# Altium PCB Lite Carrier for Mu.PcbDoc (part 1 of 15)
Units mm, origin at the board's own origin, x right, y up, seen from the top; angles counter-clockwise.
Board outline 146 x 102 mm, 20 copper layers (F.Cu, F.Mask, B.Cu, B.Mask, In1.Cu, F.SilkS, In2.Cu, B.SilkS, F.Adhes, B.Adhes, F.Paste, B.Paste, Dwgs.User, Cmts.User, Eco1.User, Eco2.User, Edge.Cuts, Margin, B.CrtYd, F.CrtYd); 254 components, 382 nets, 1258 pads, 1020 vias.
Unrouted connection lines stored in the file: 113.
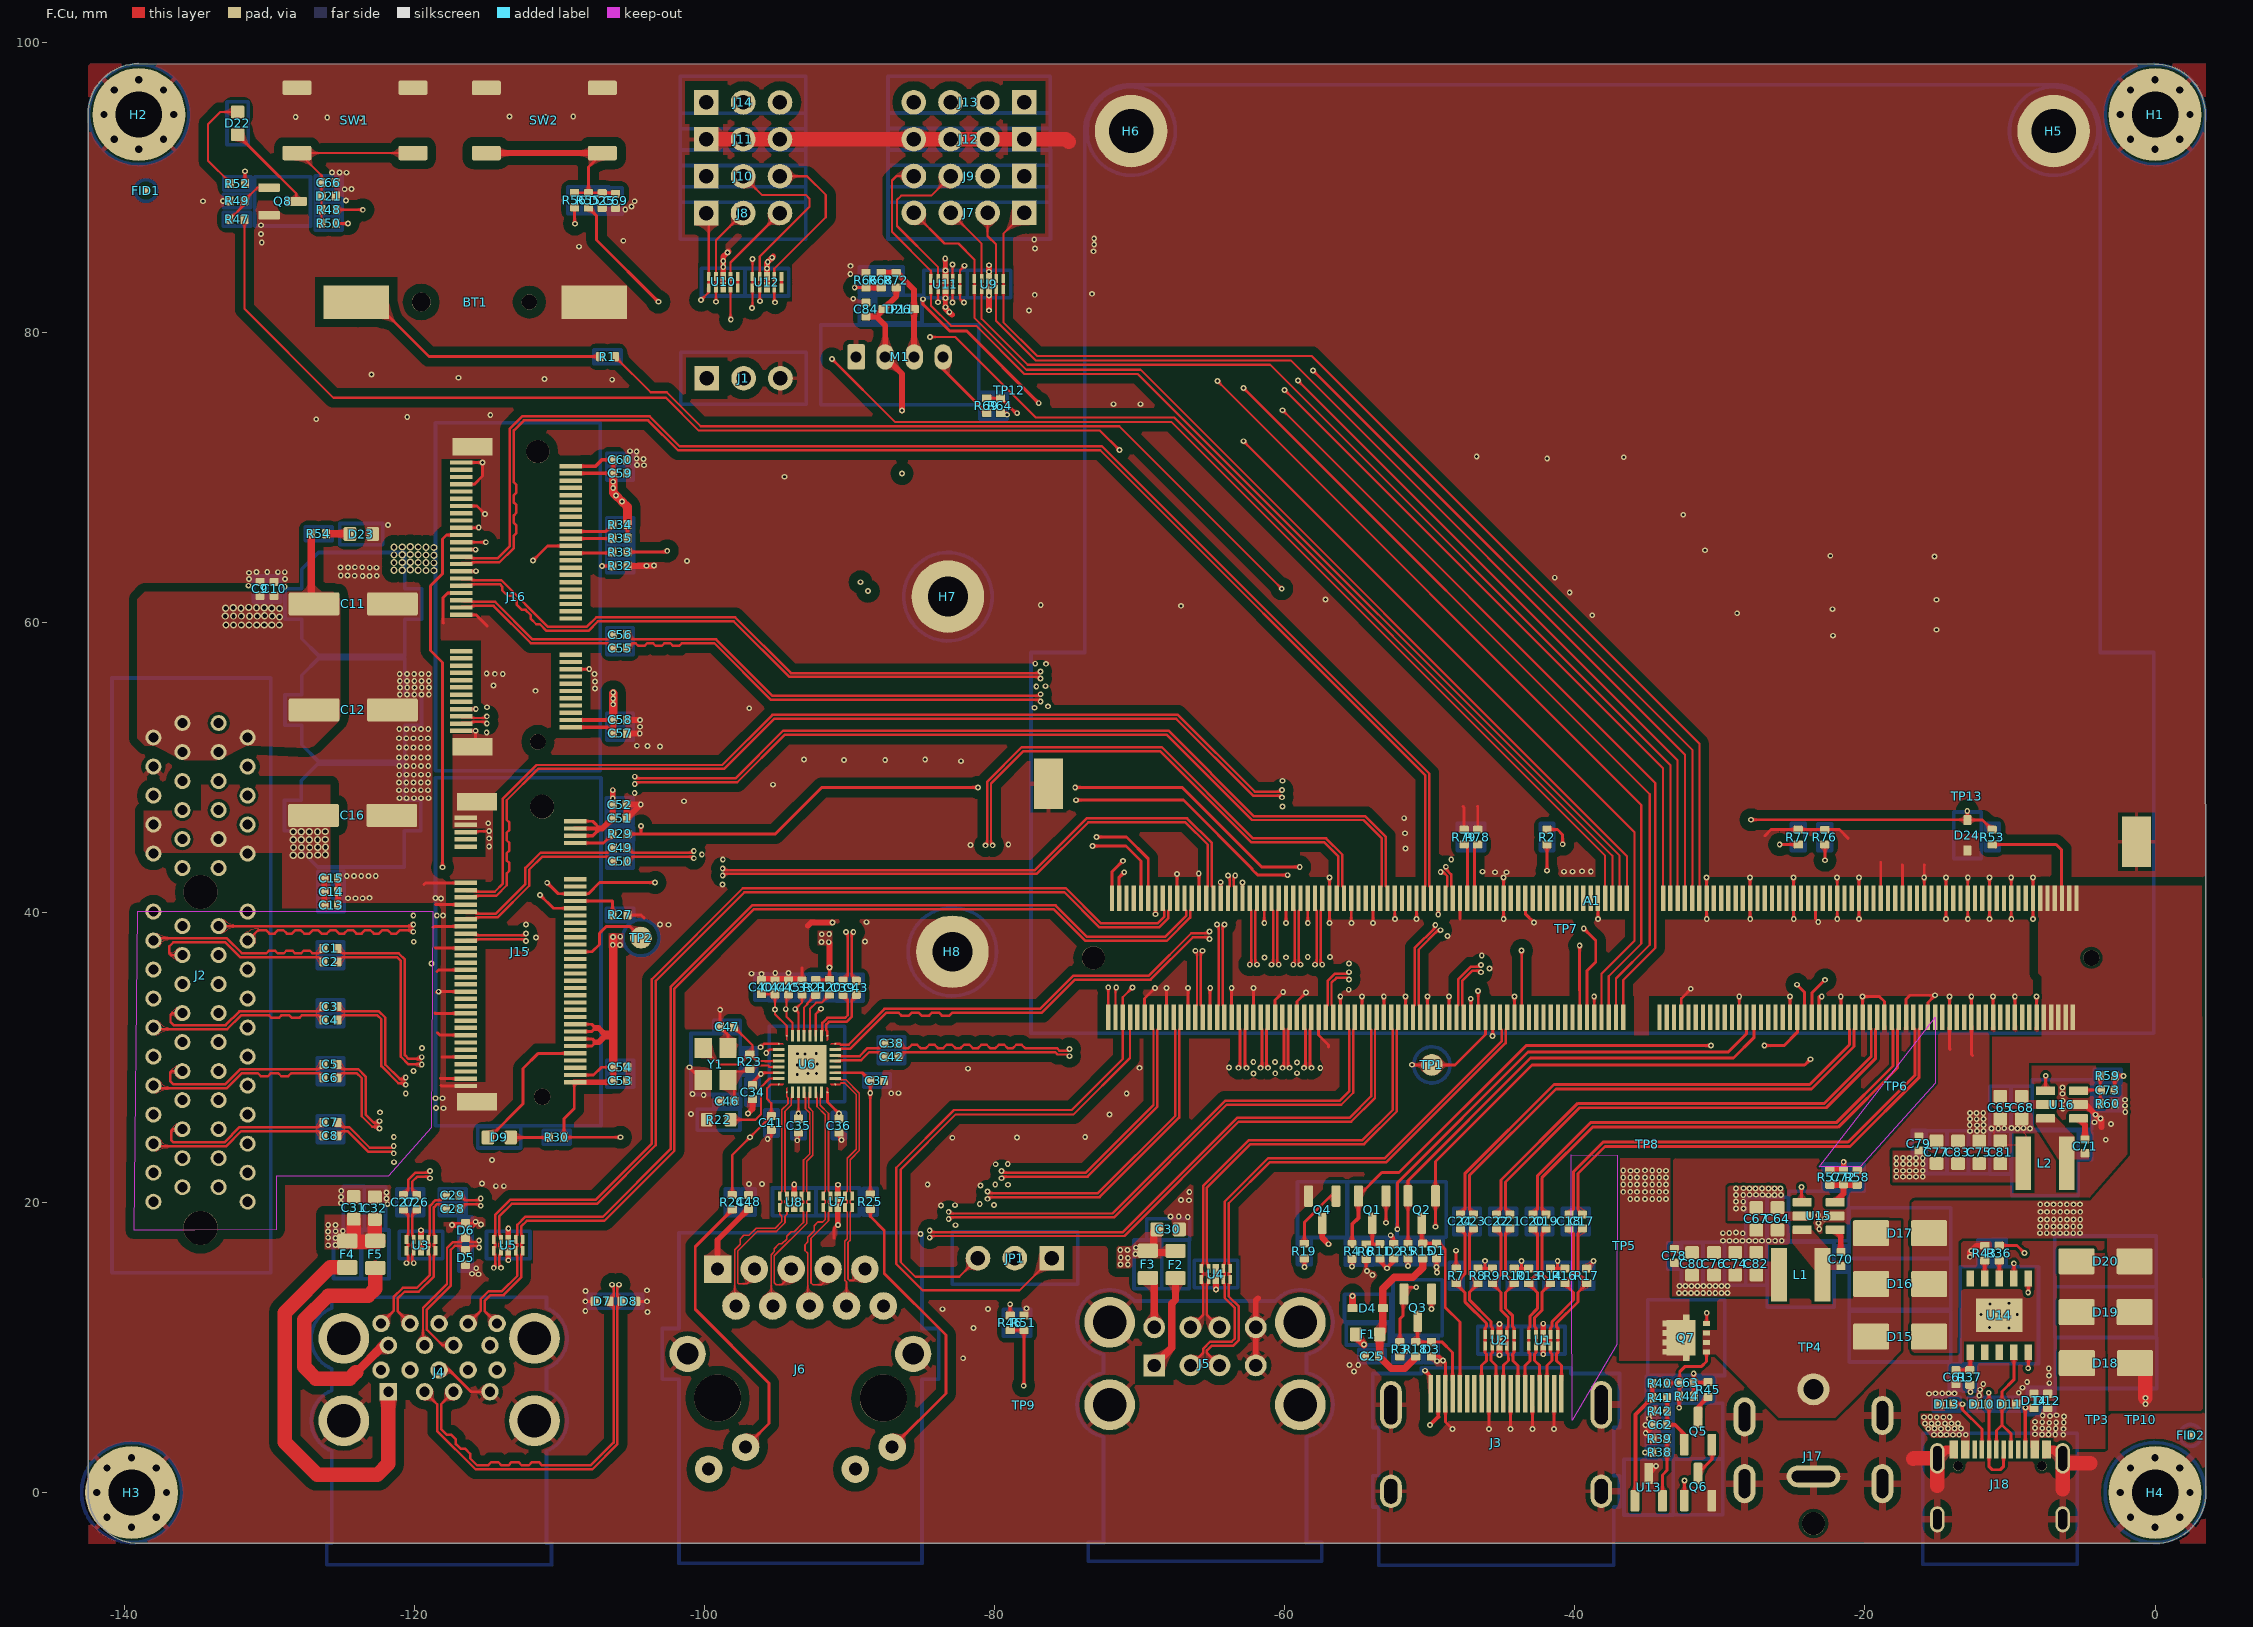
[diagram p0: F.Cu view]
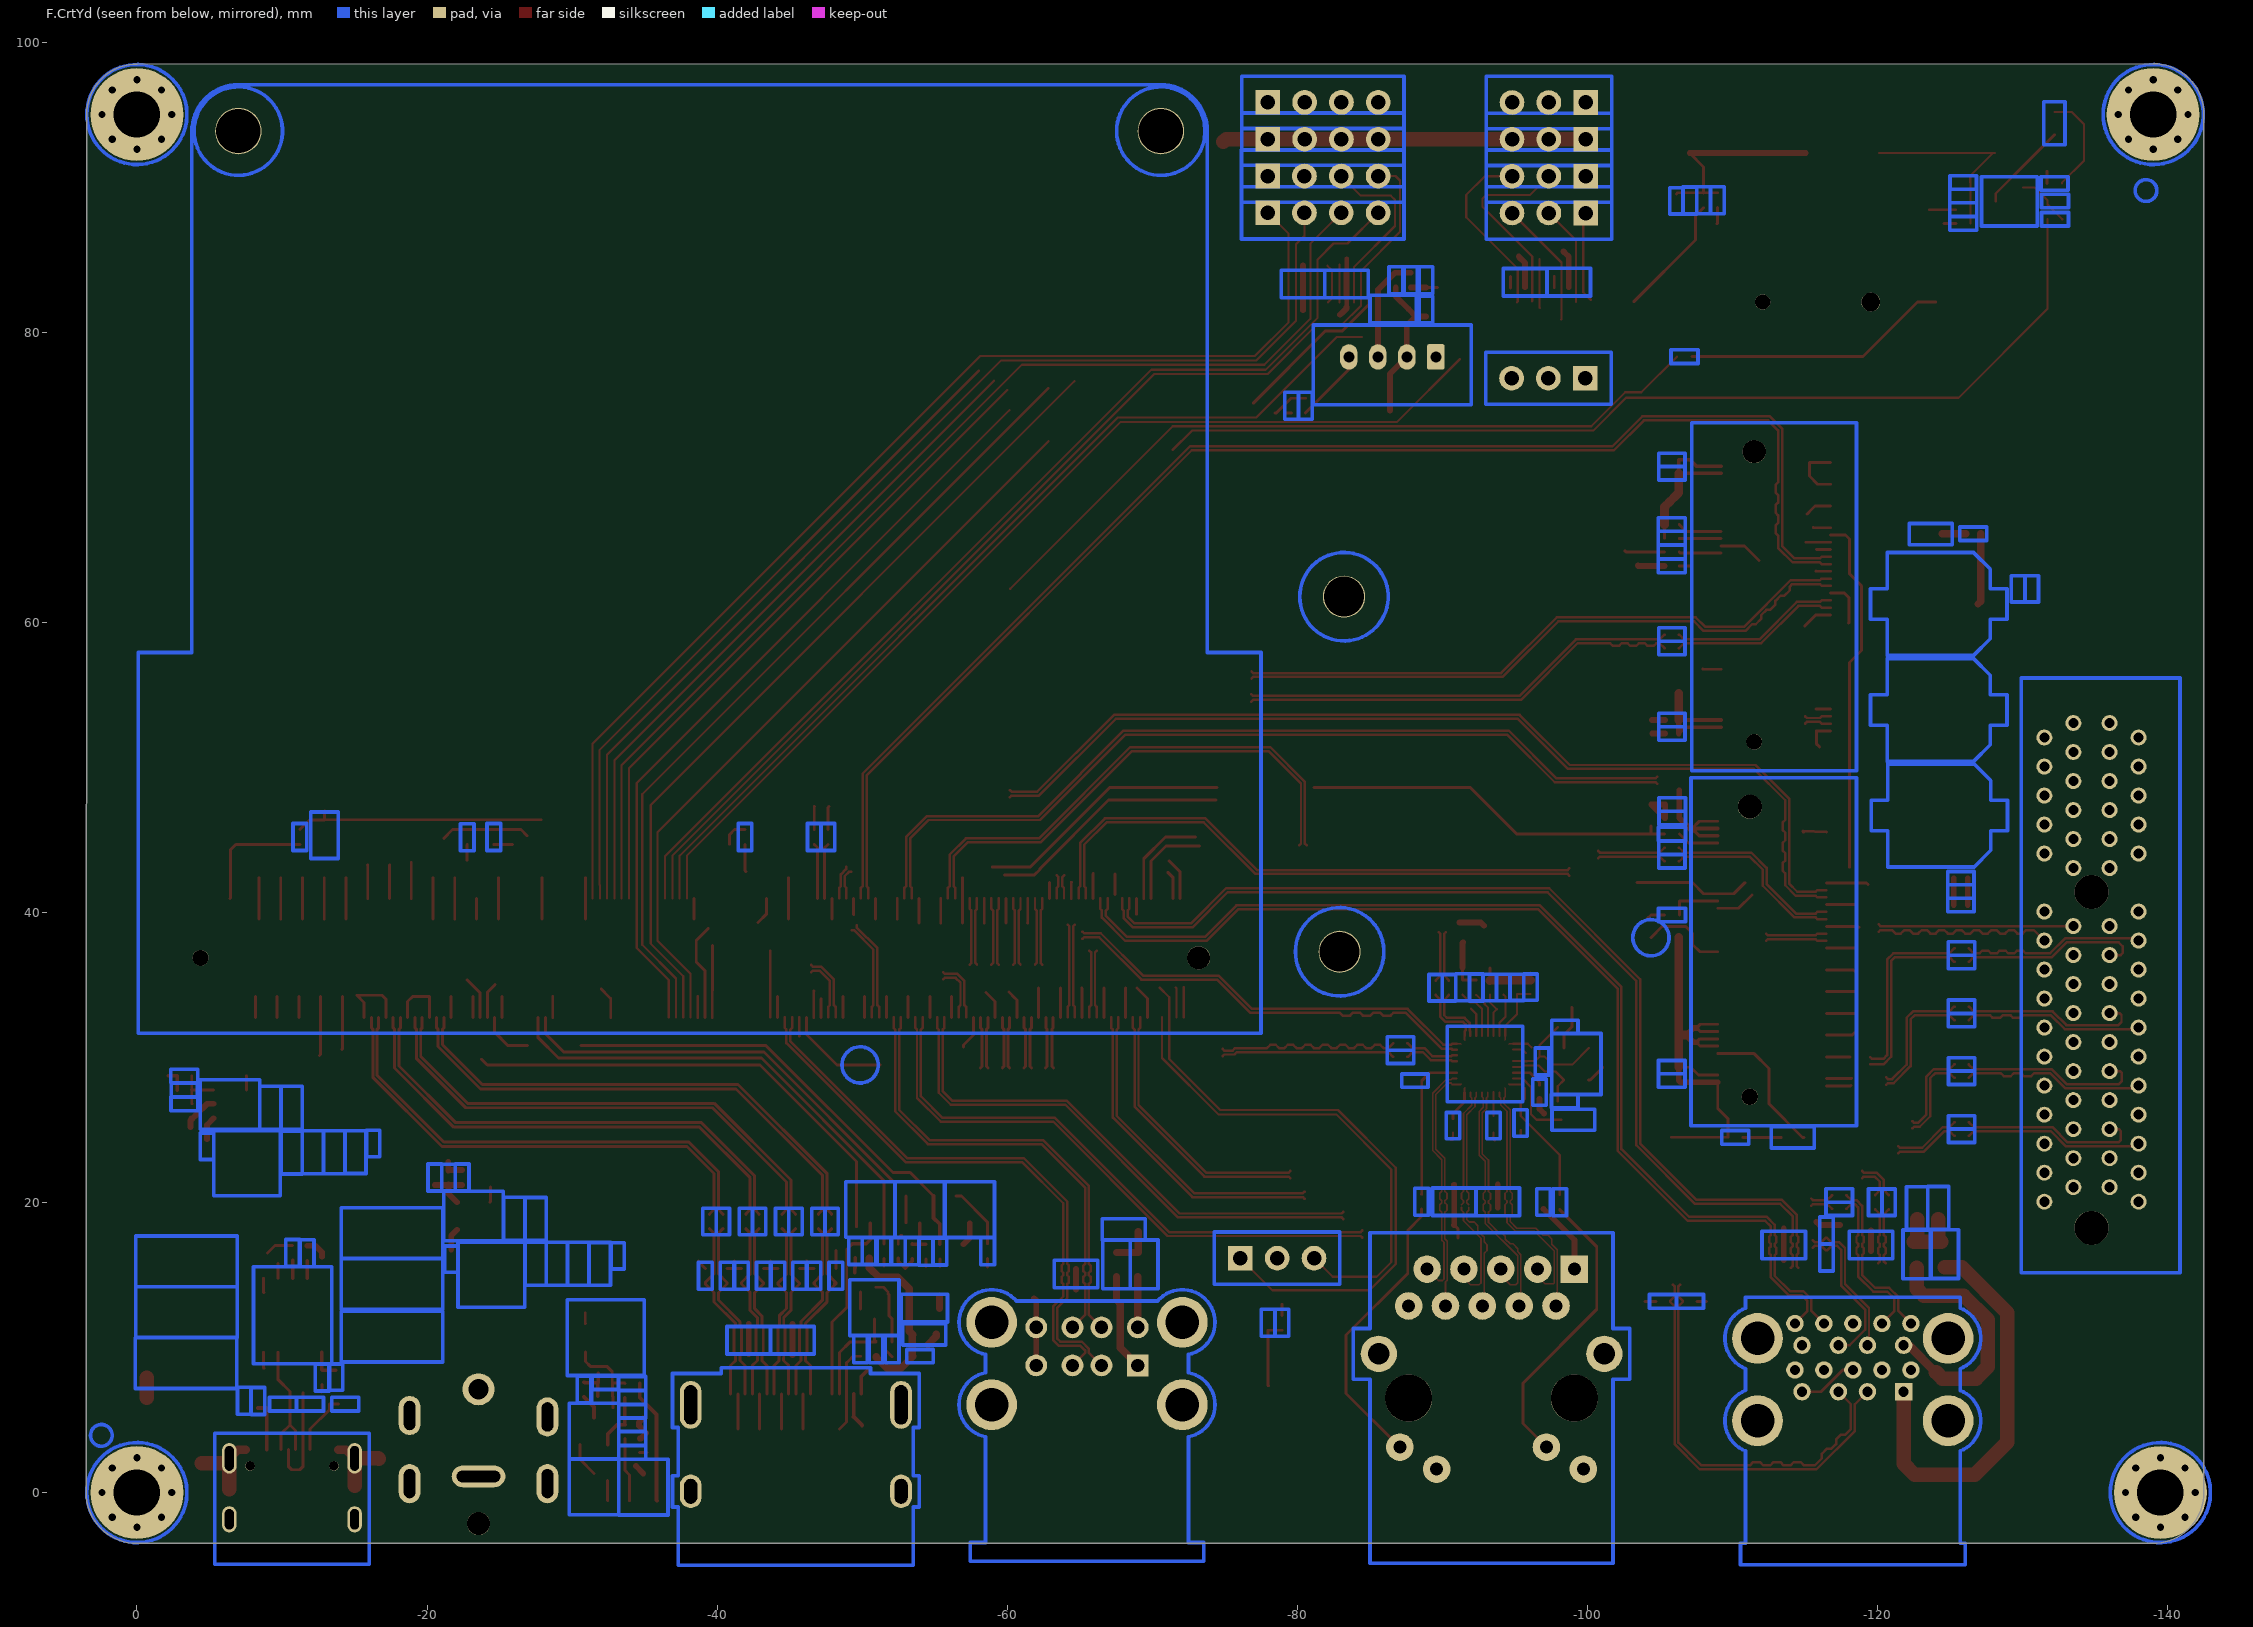
[diagram p1: F.CrtYd view, seen from below]
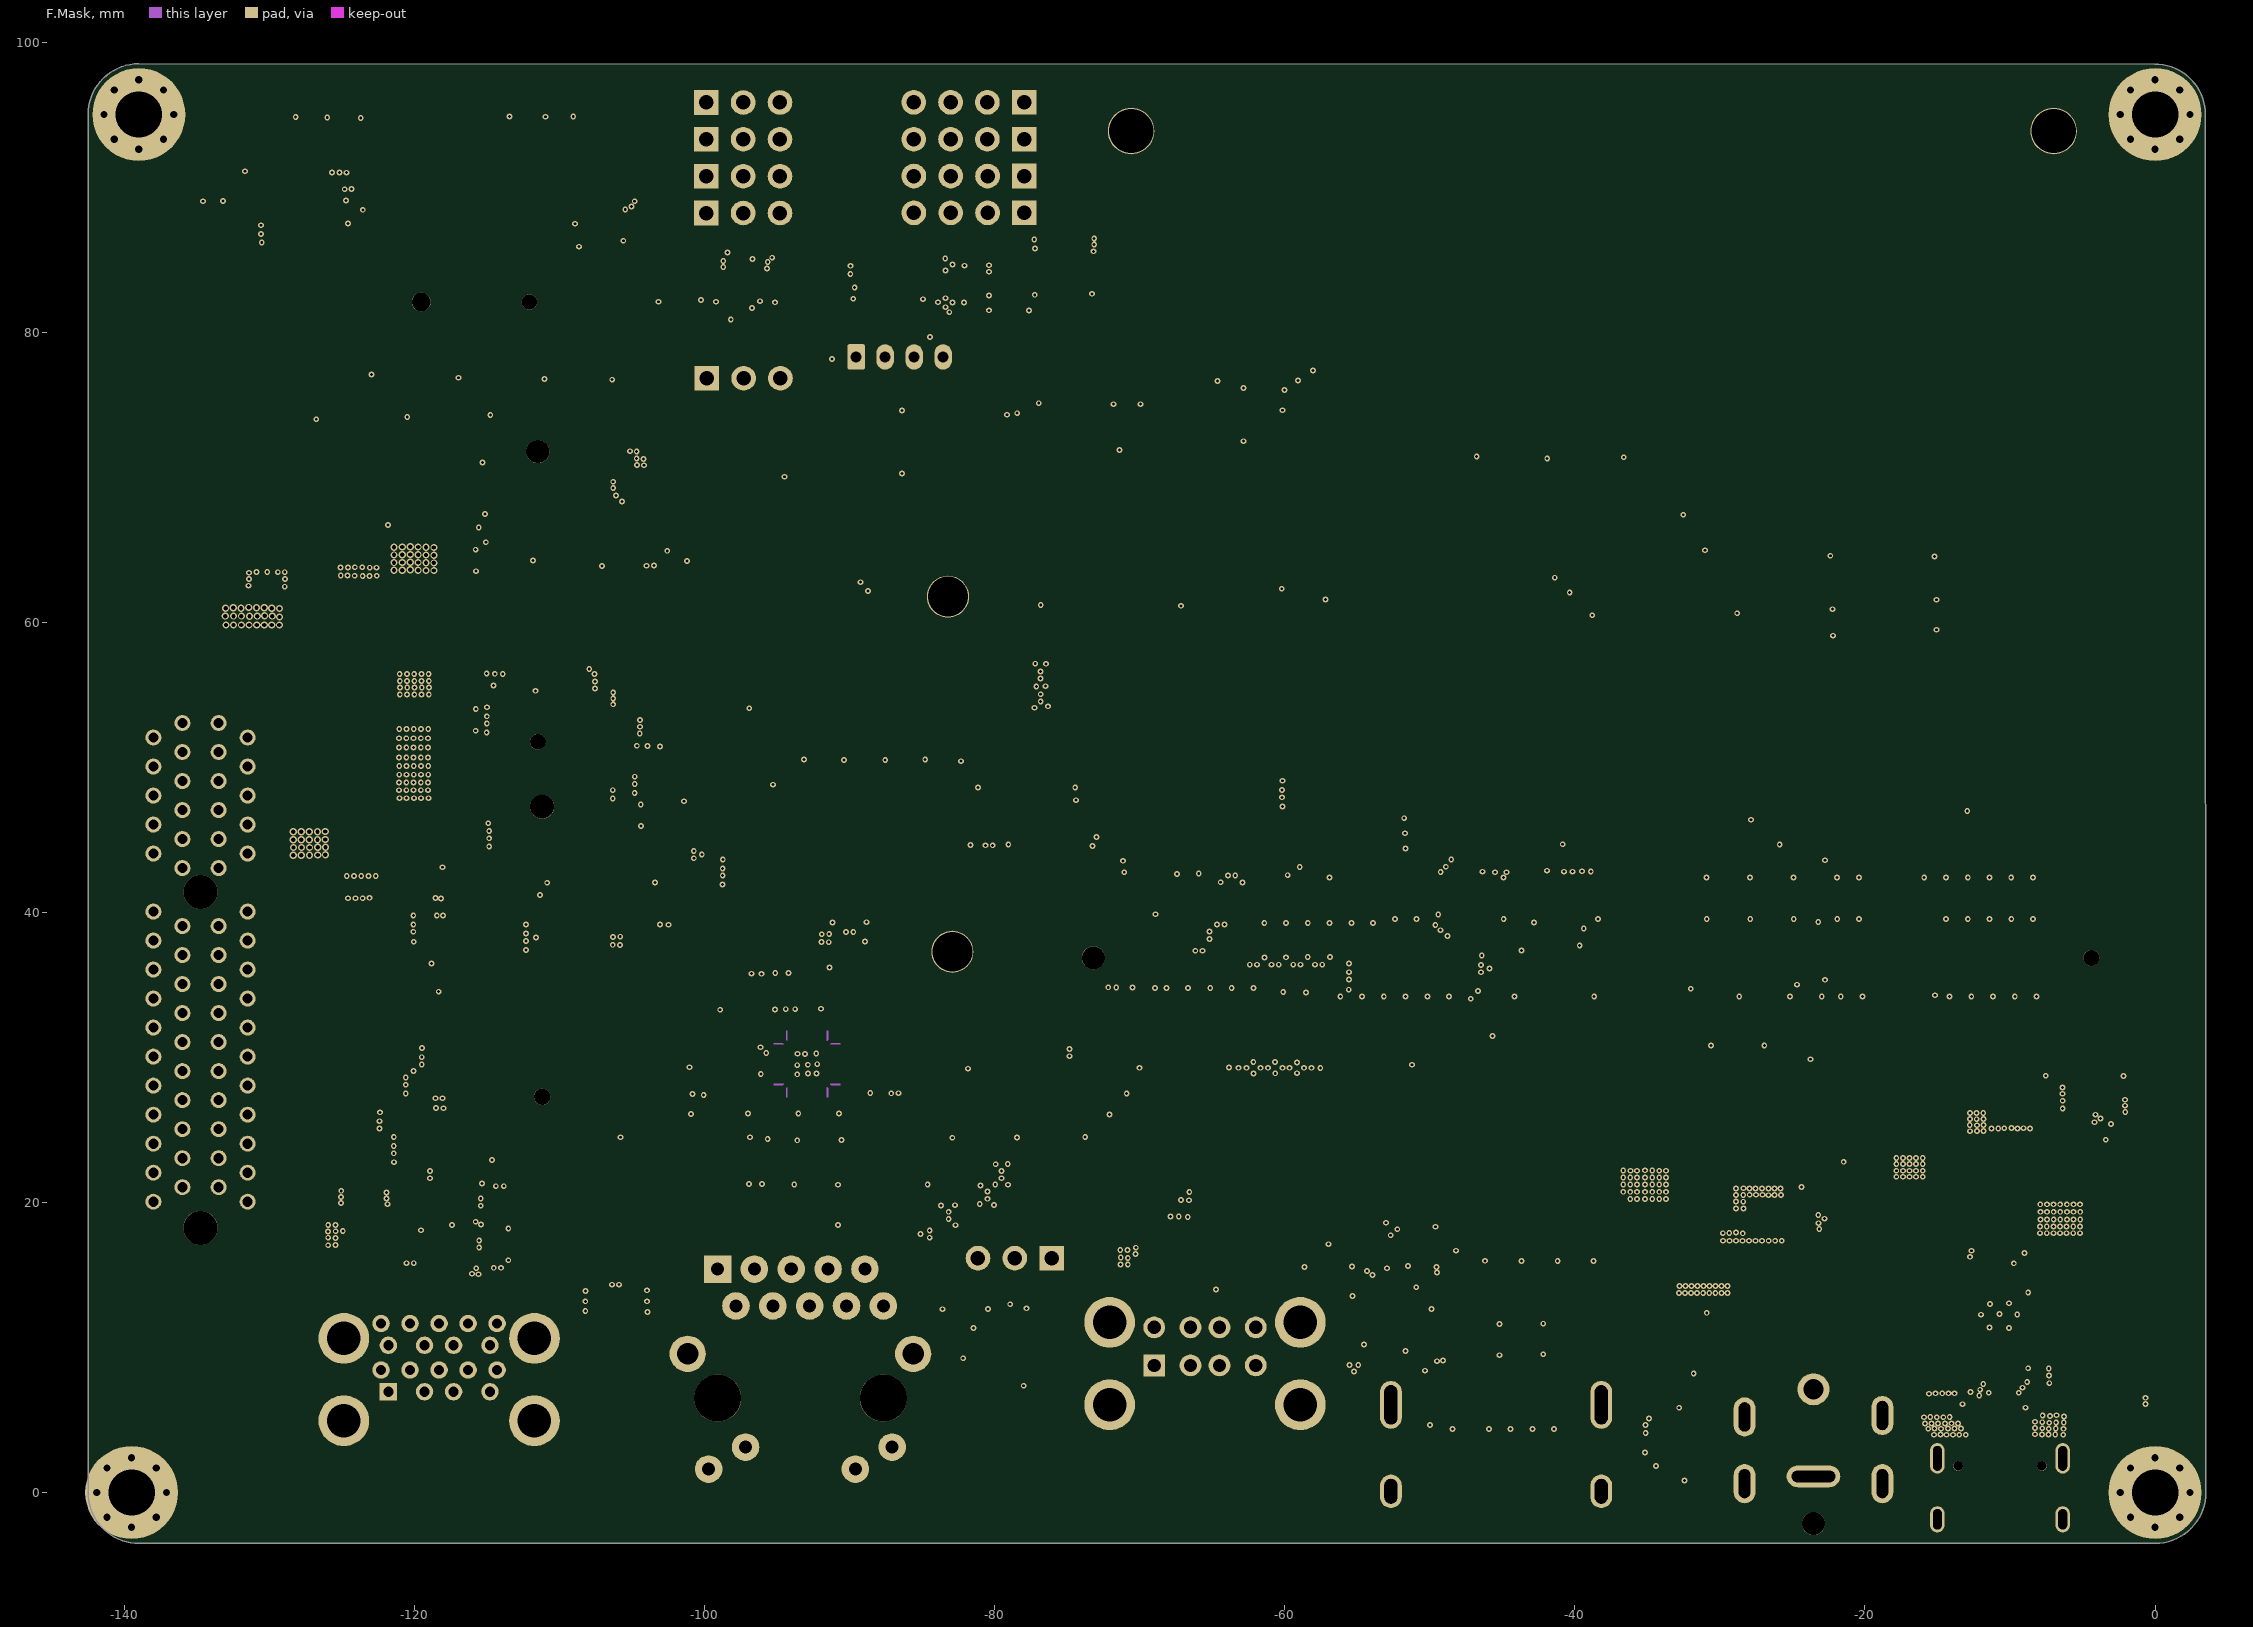
[diagram p2: F.Mask]
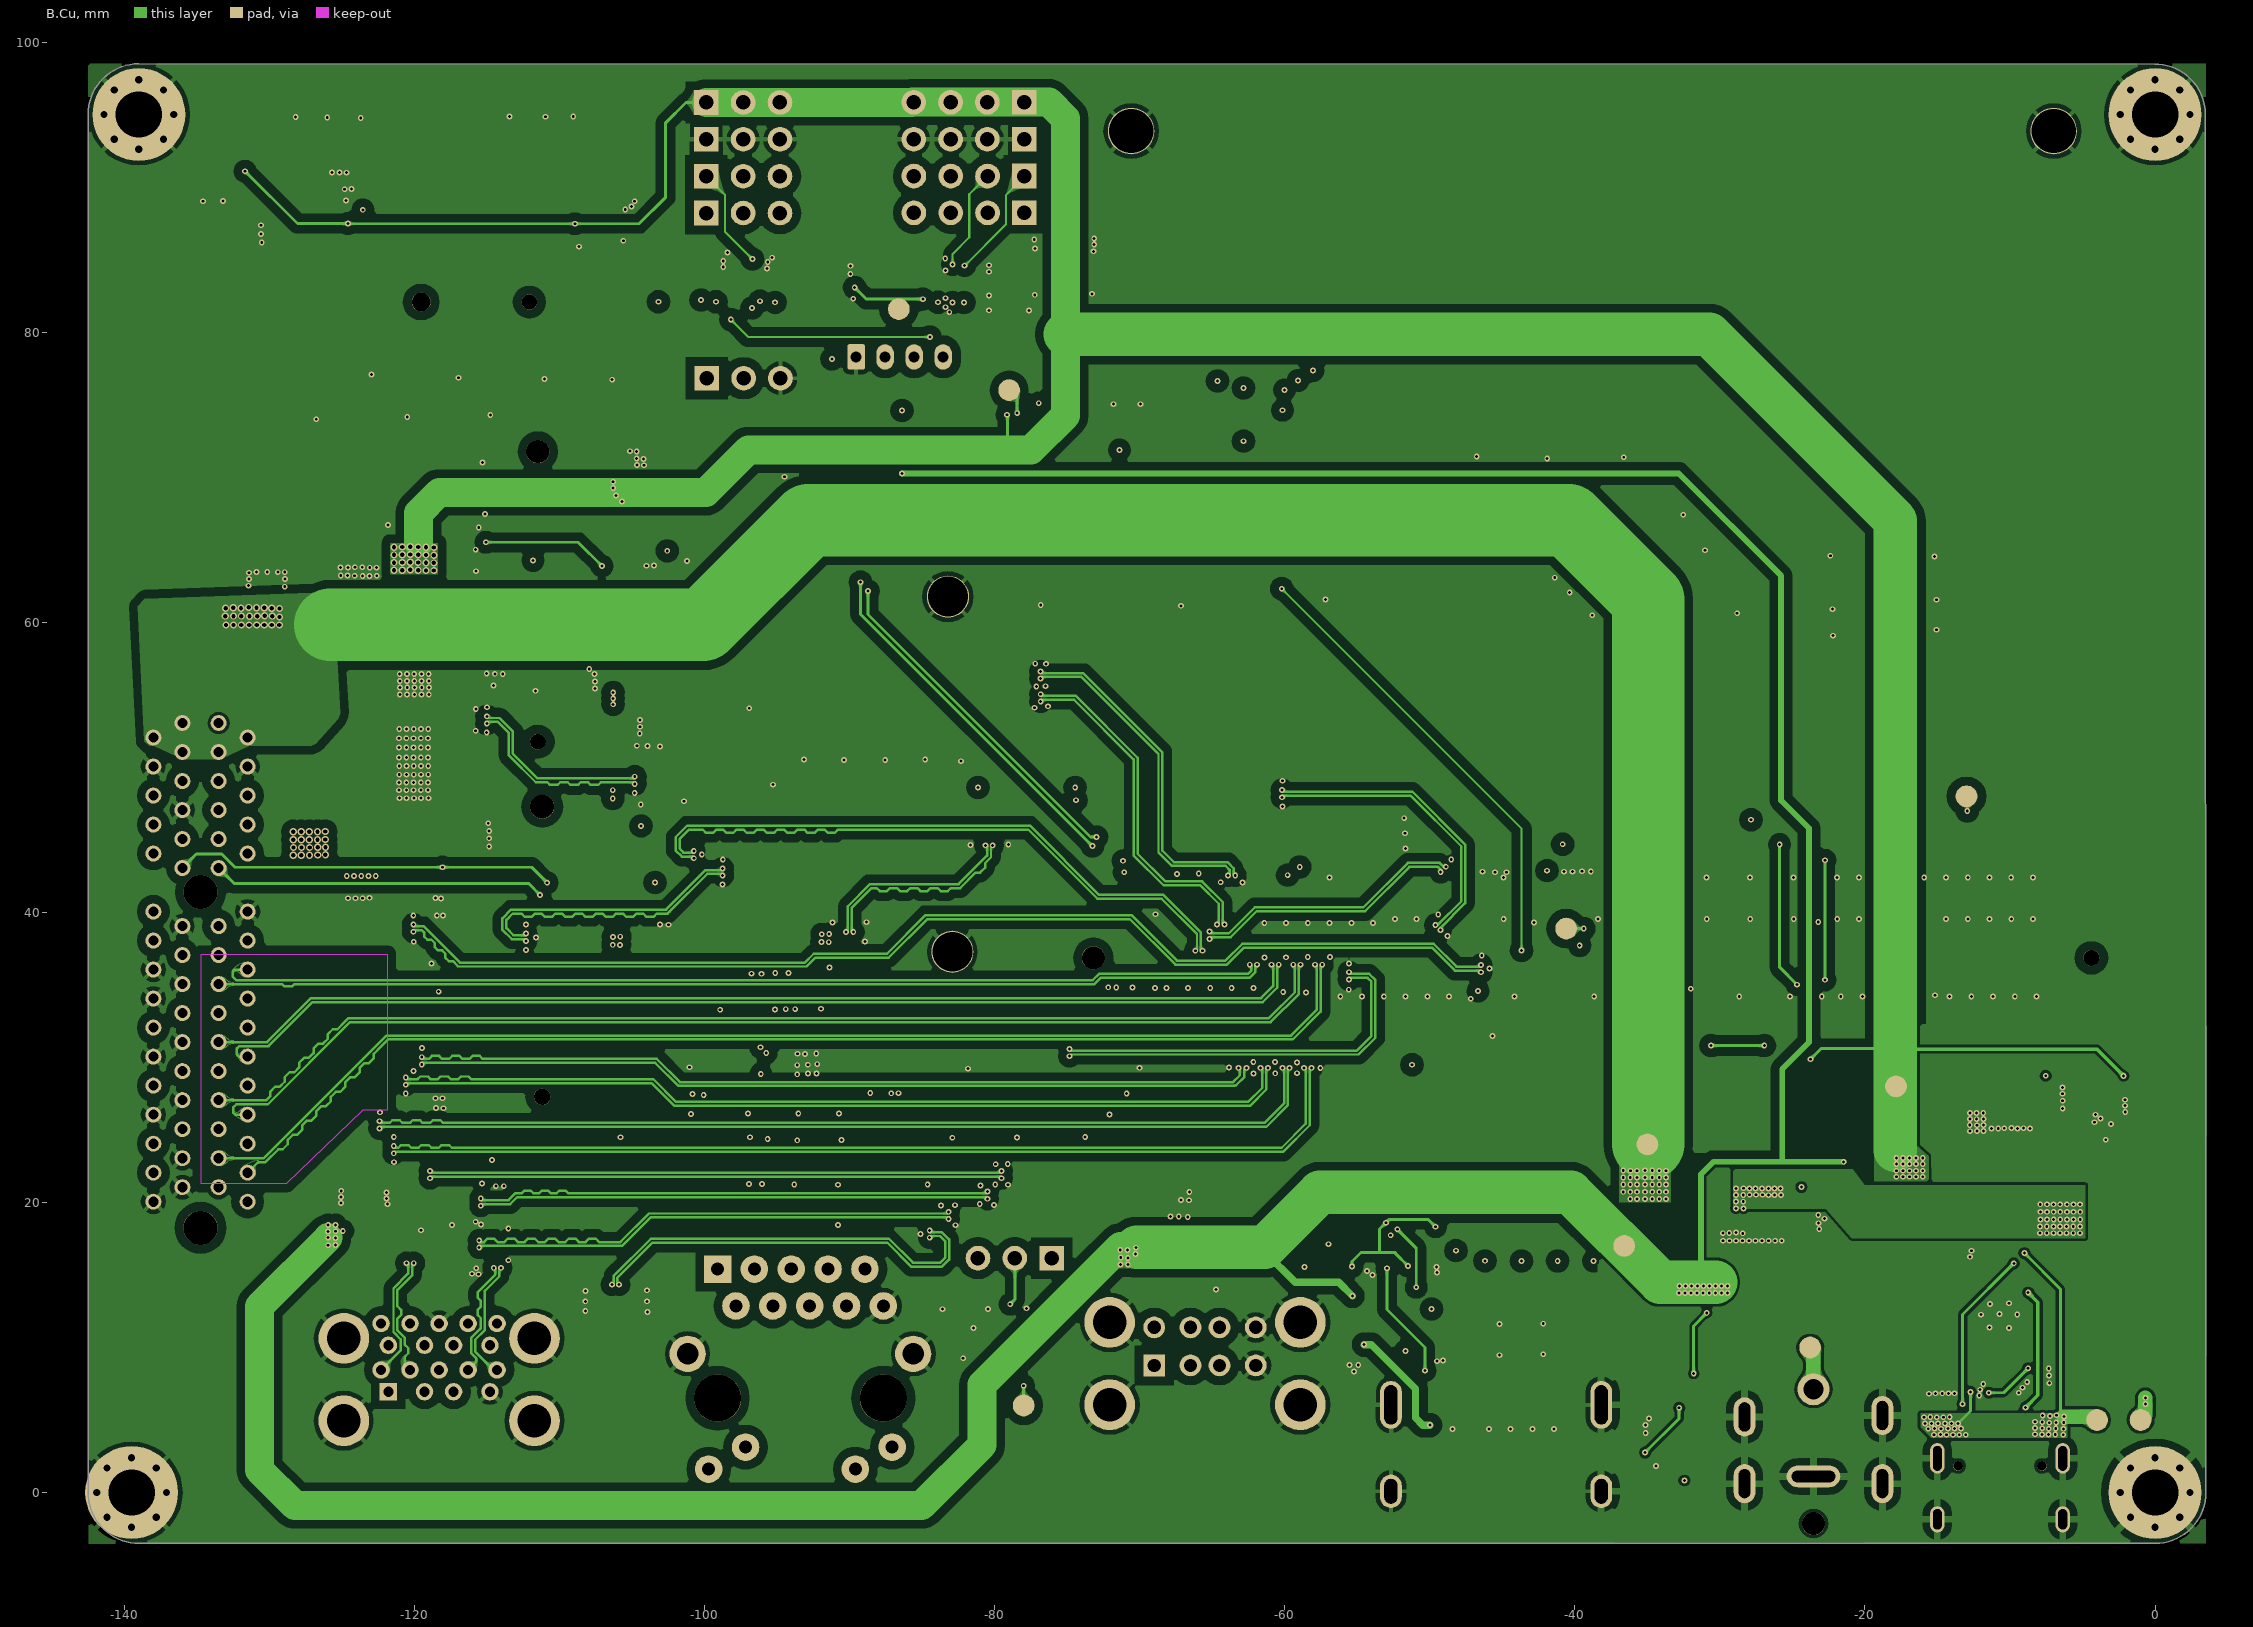
[diagram p3: B.Cu]
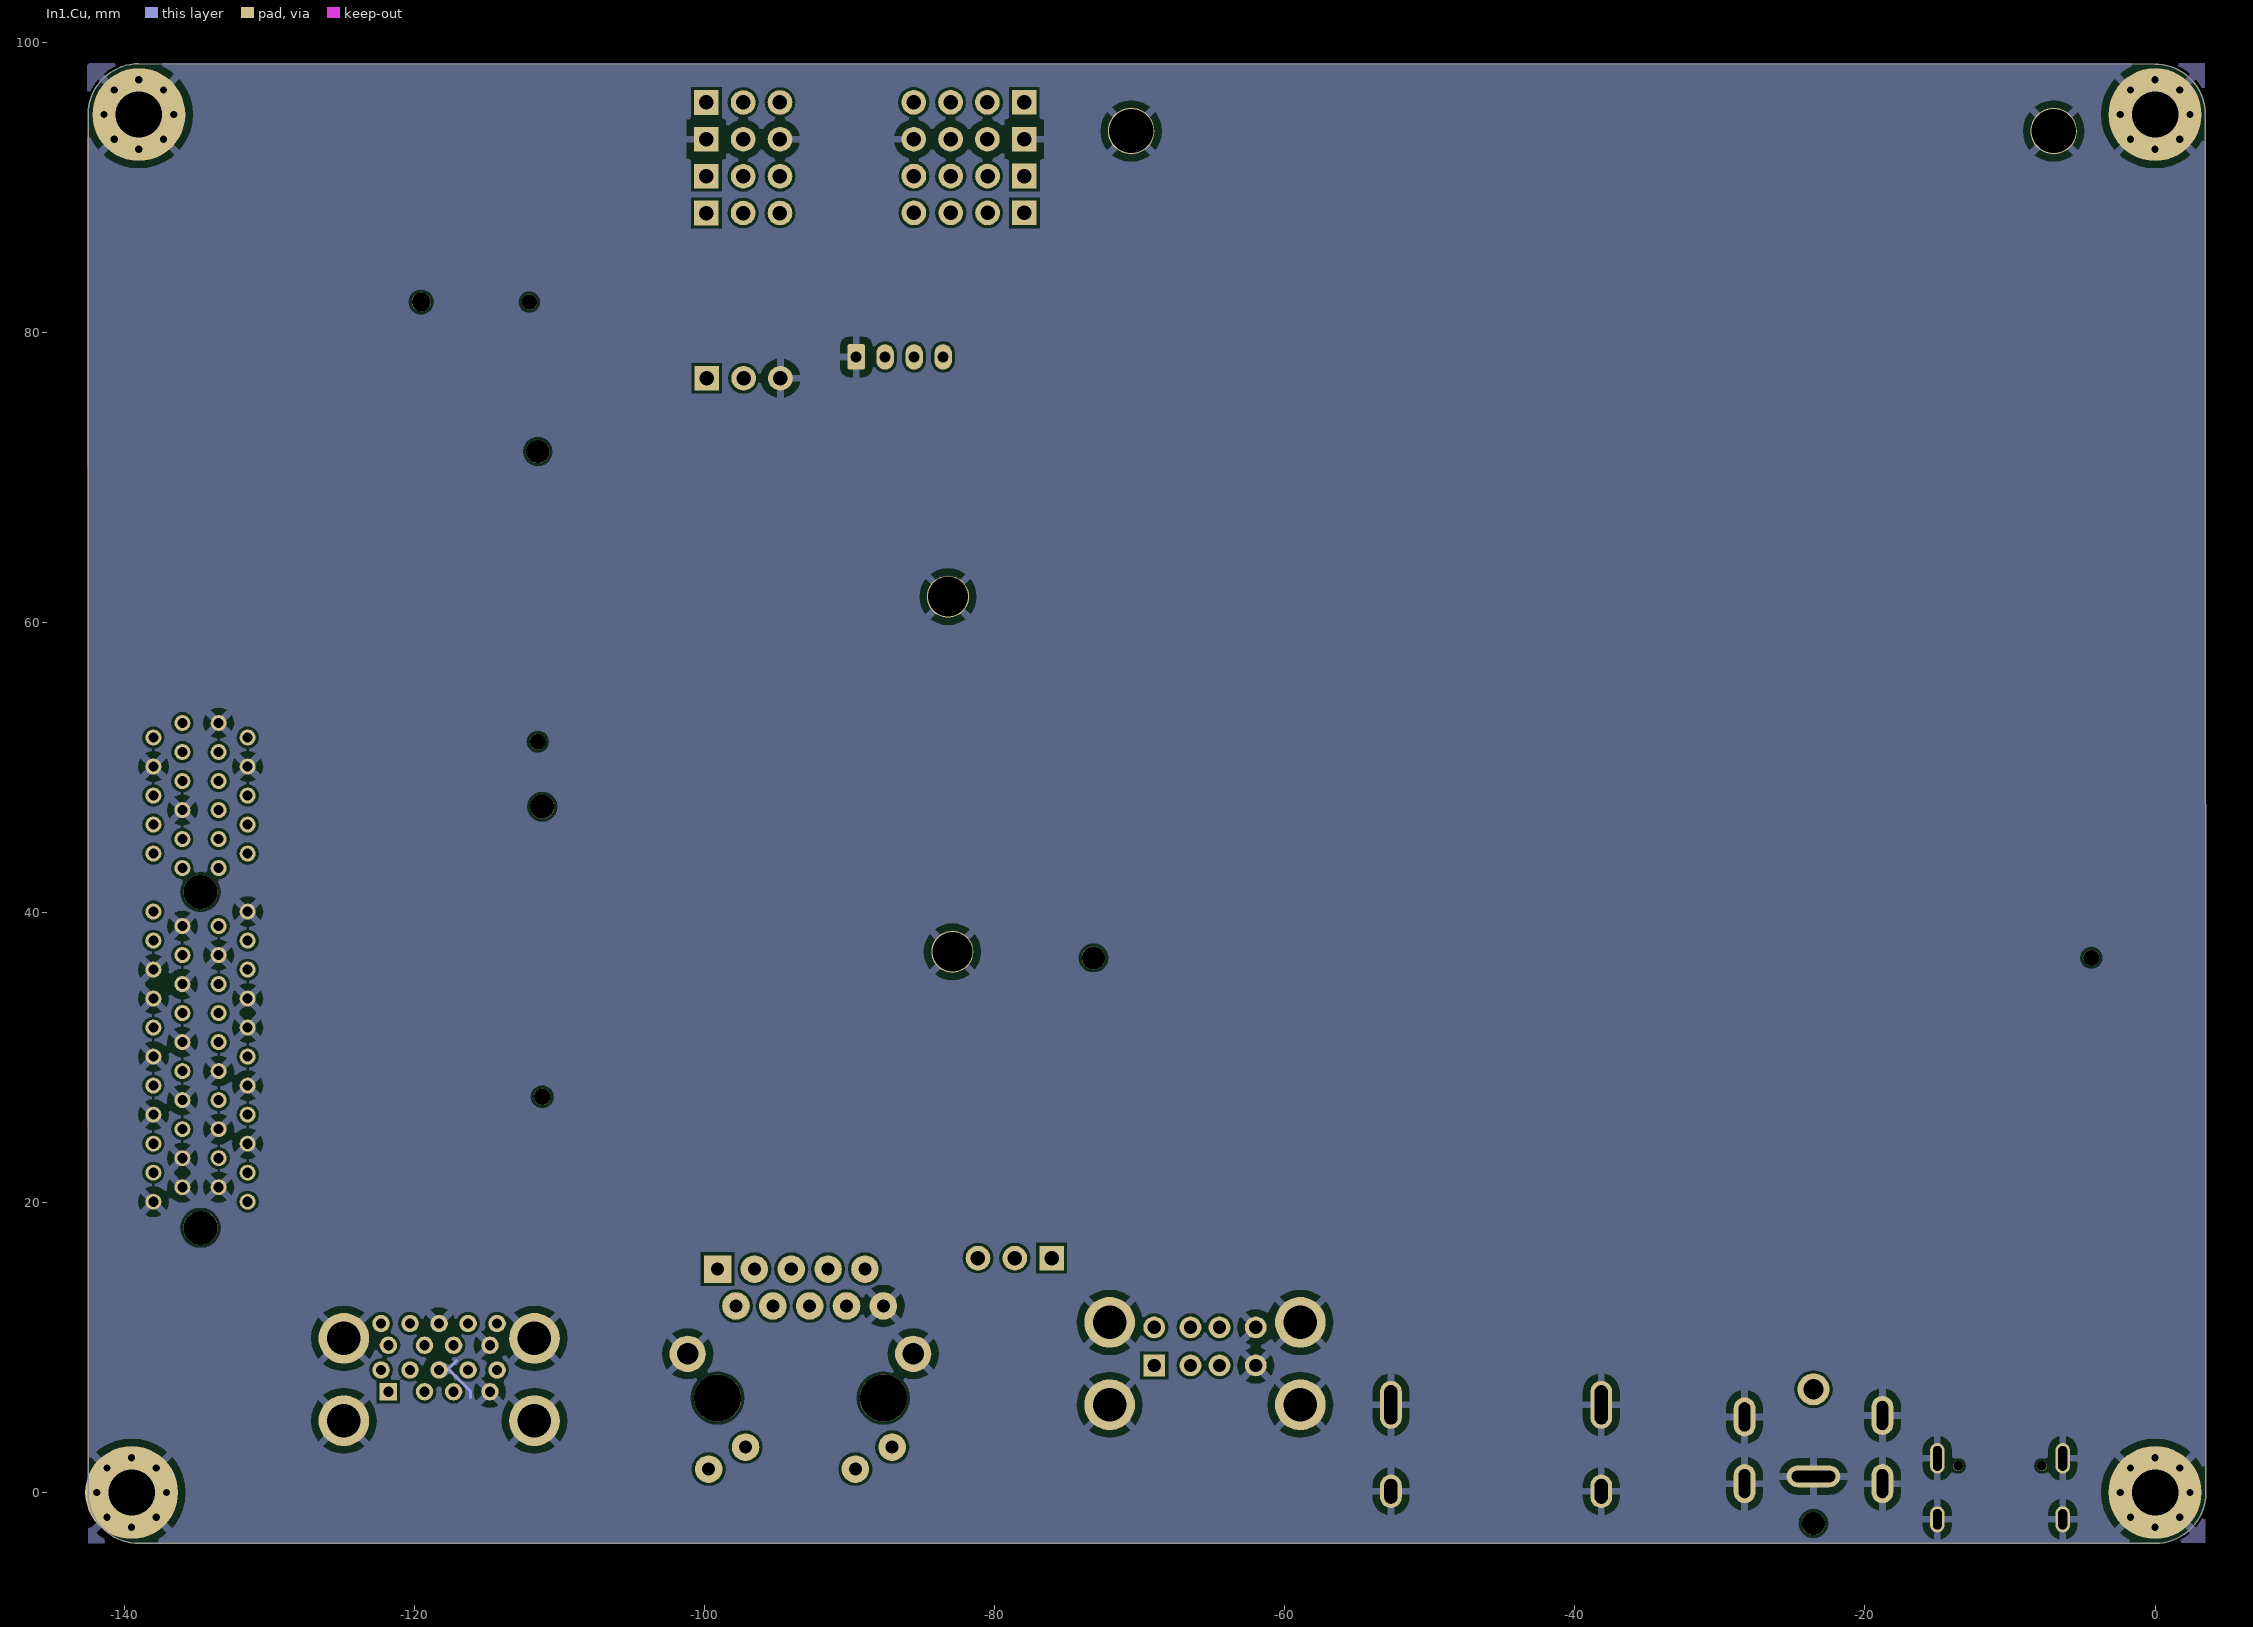
[diagram p4: In1.Cu]
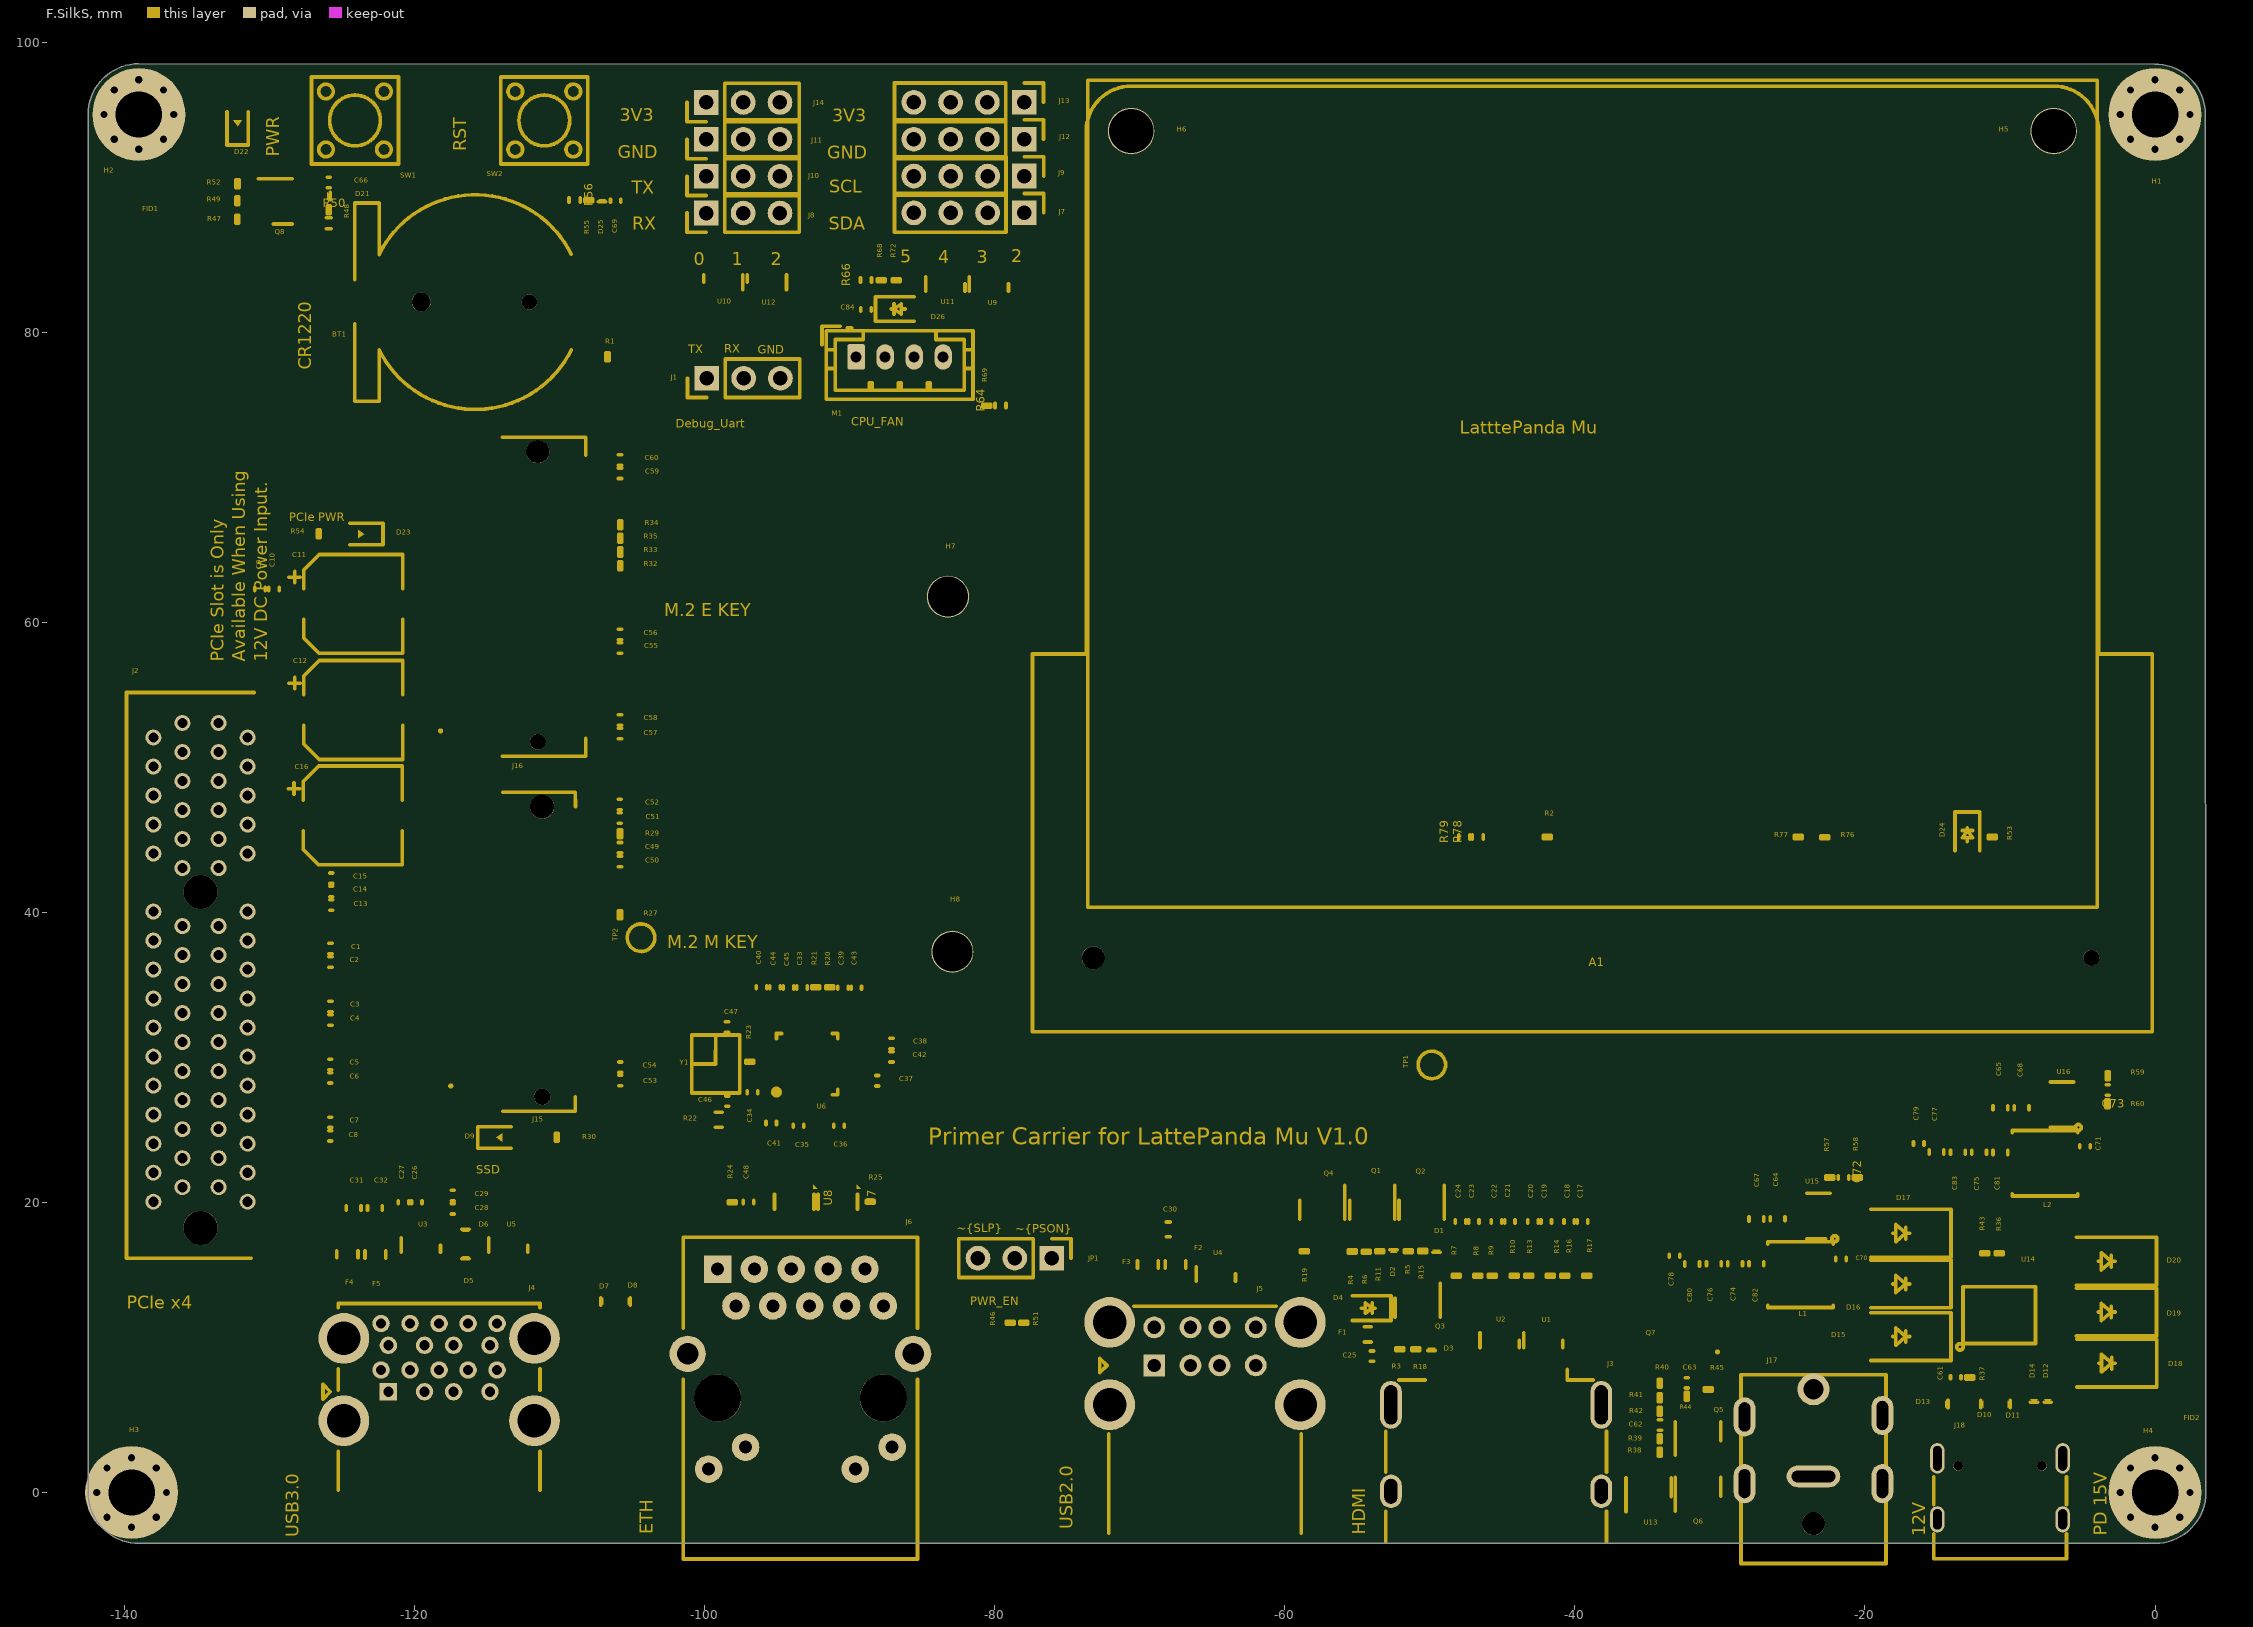
[diagram p5: F.SilkS]
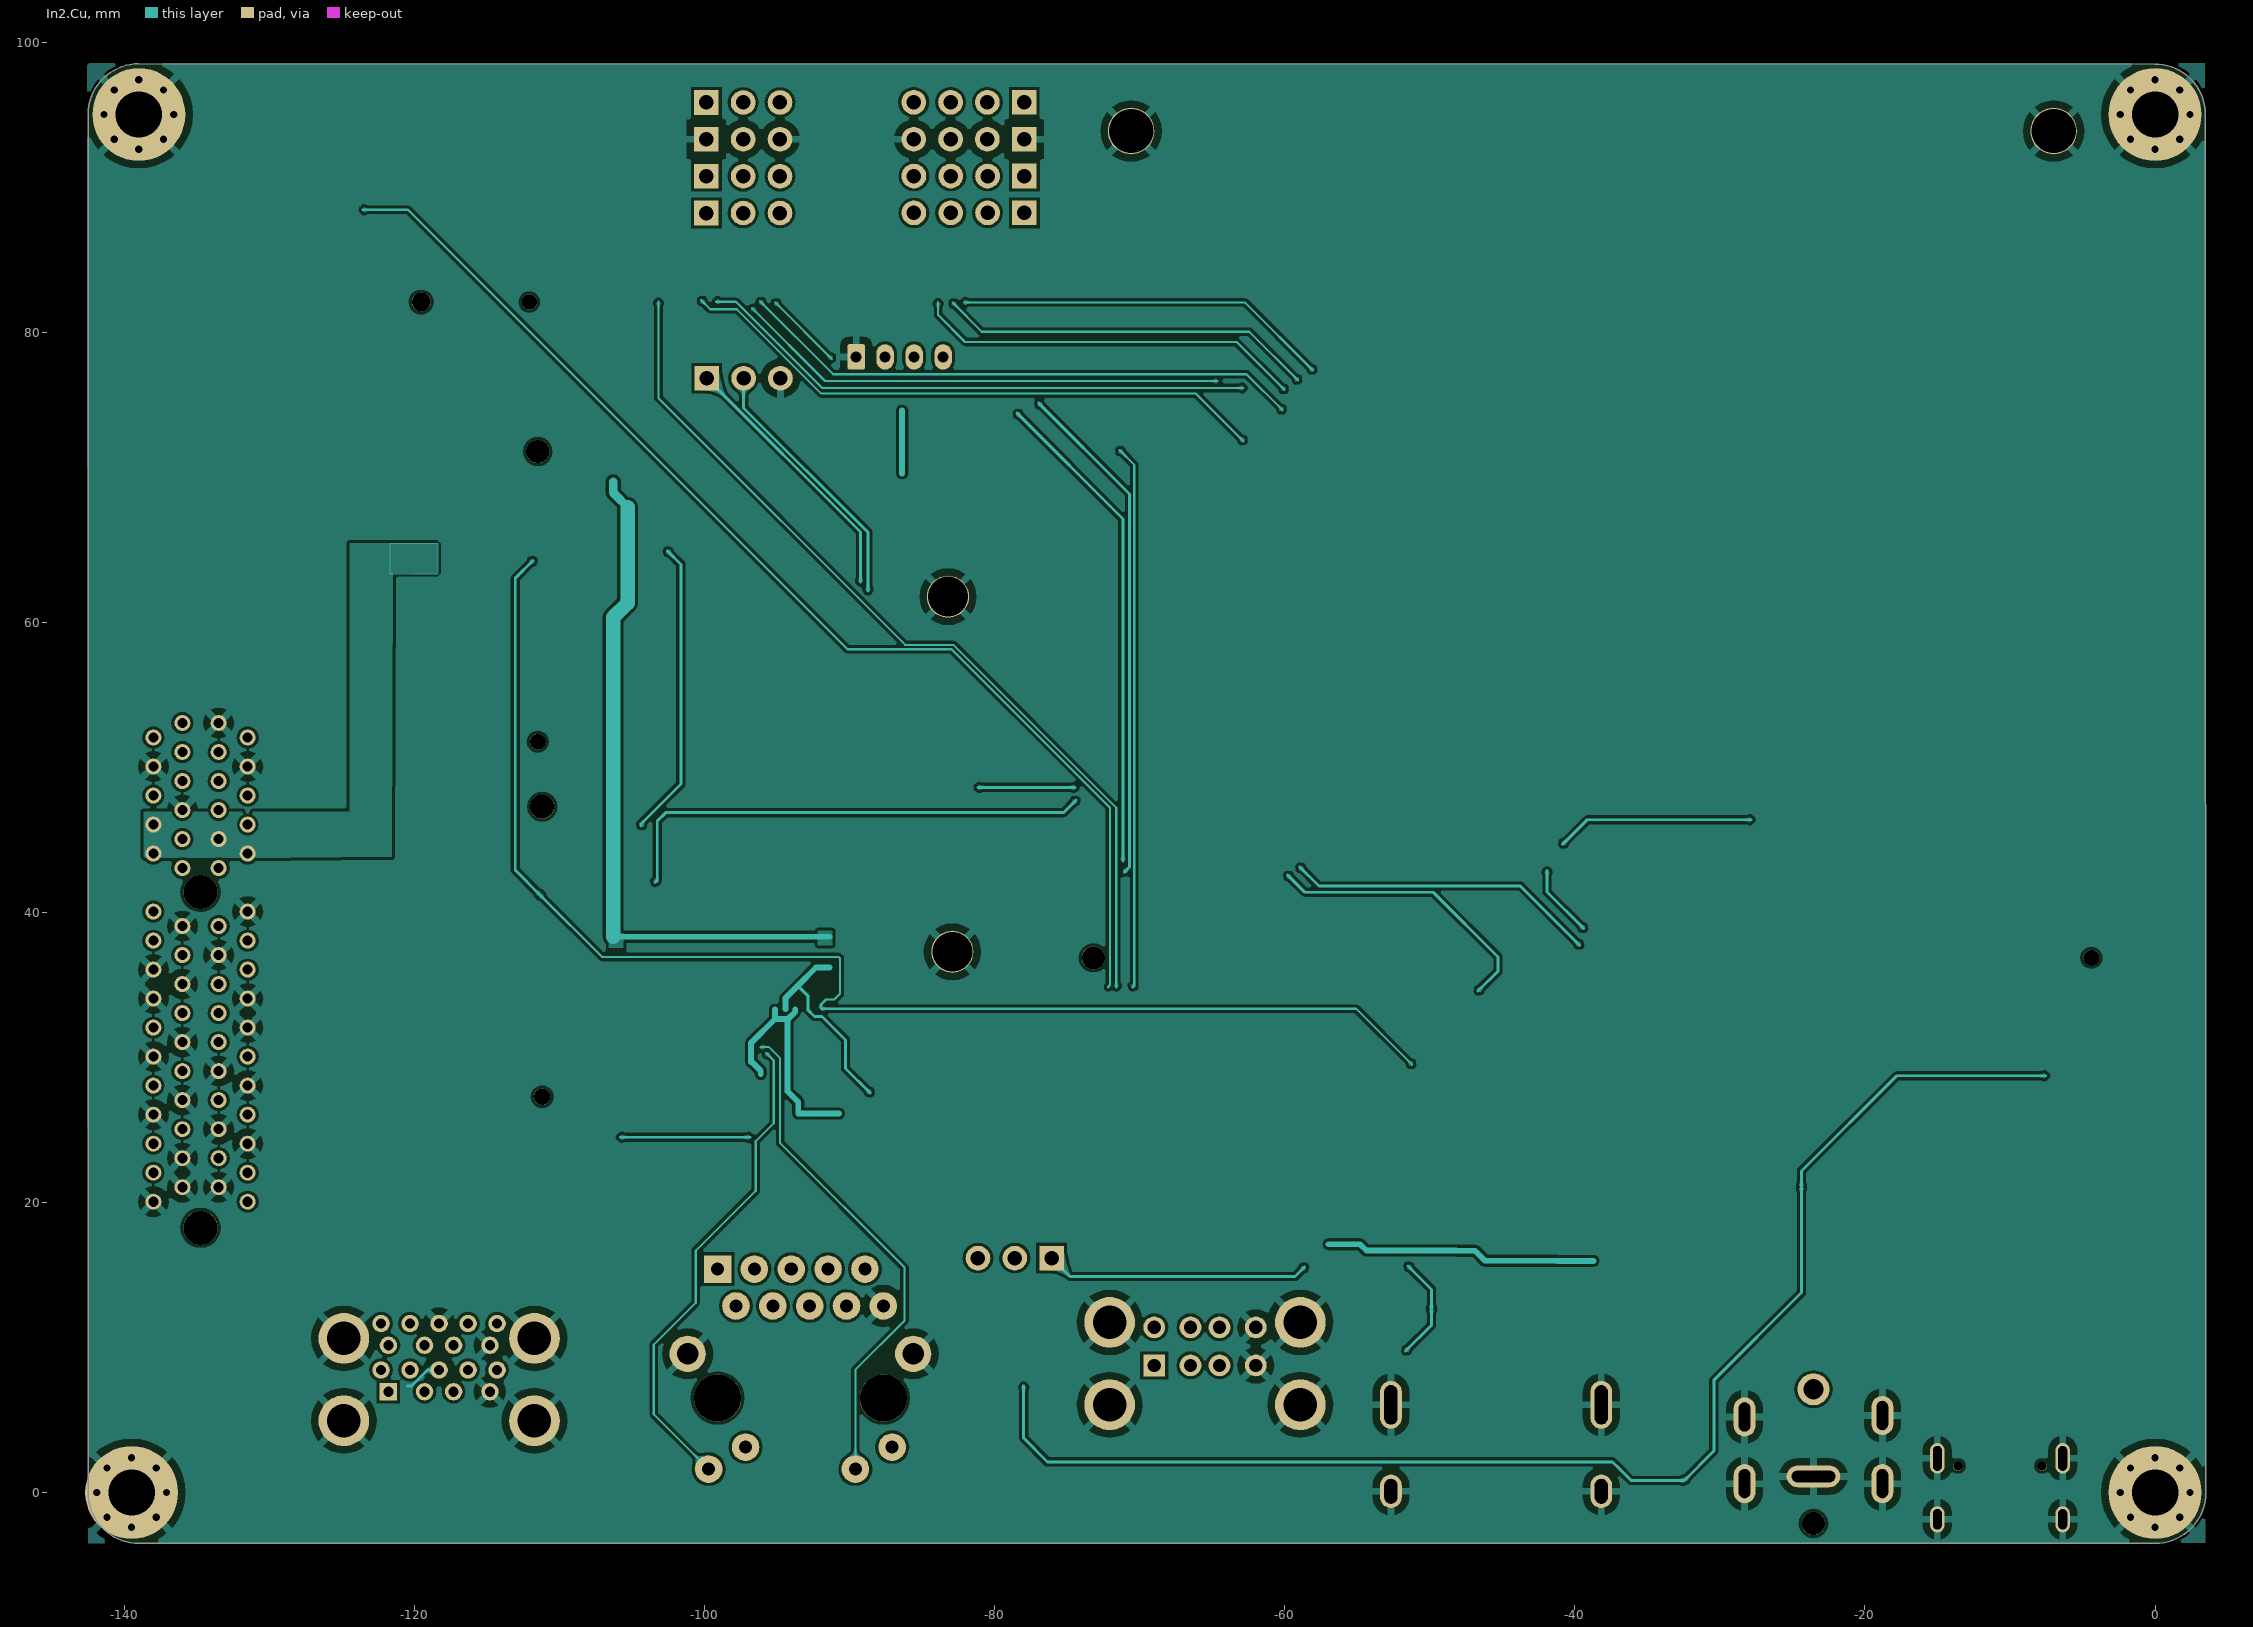
[diagram p6: In2.Cu]
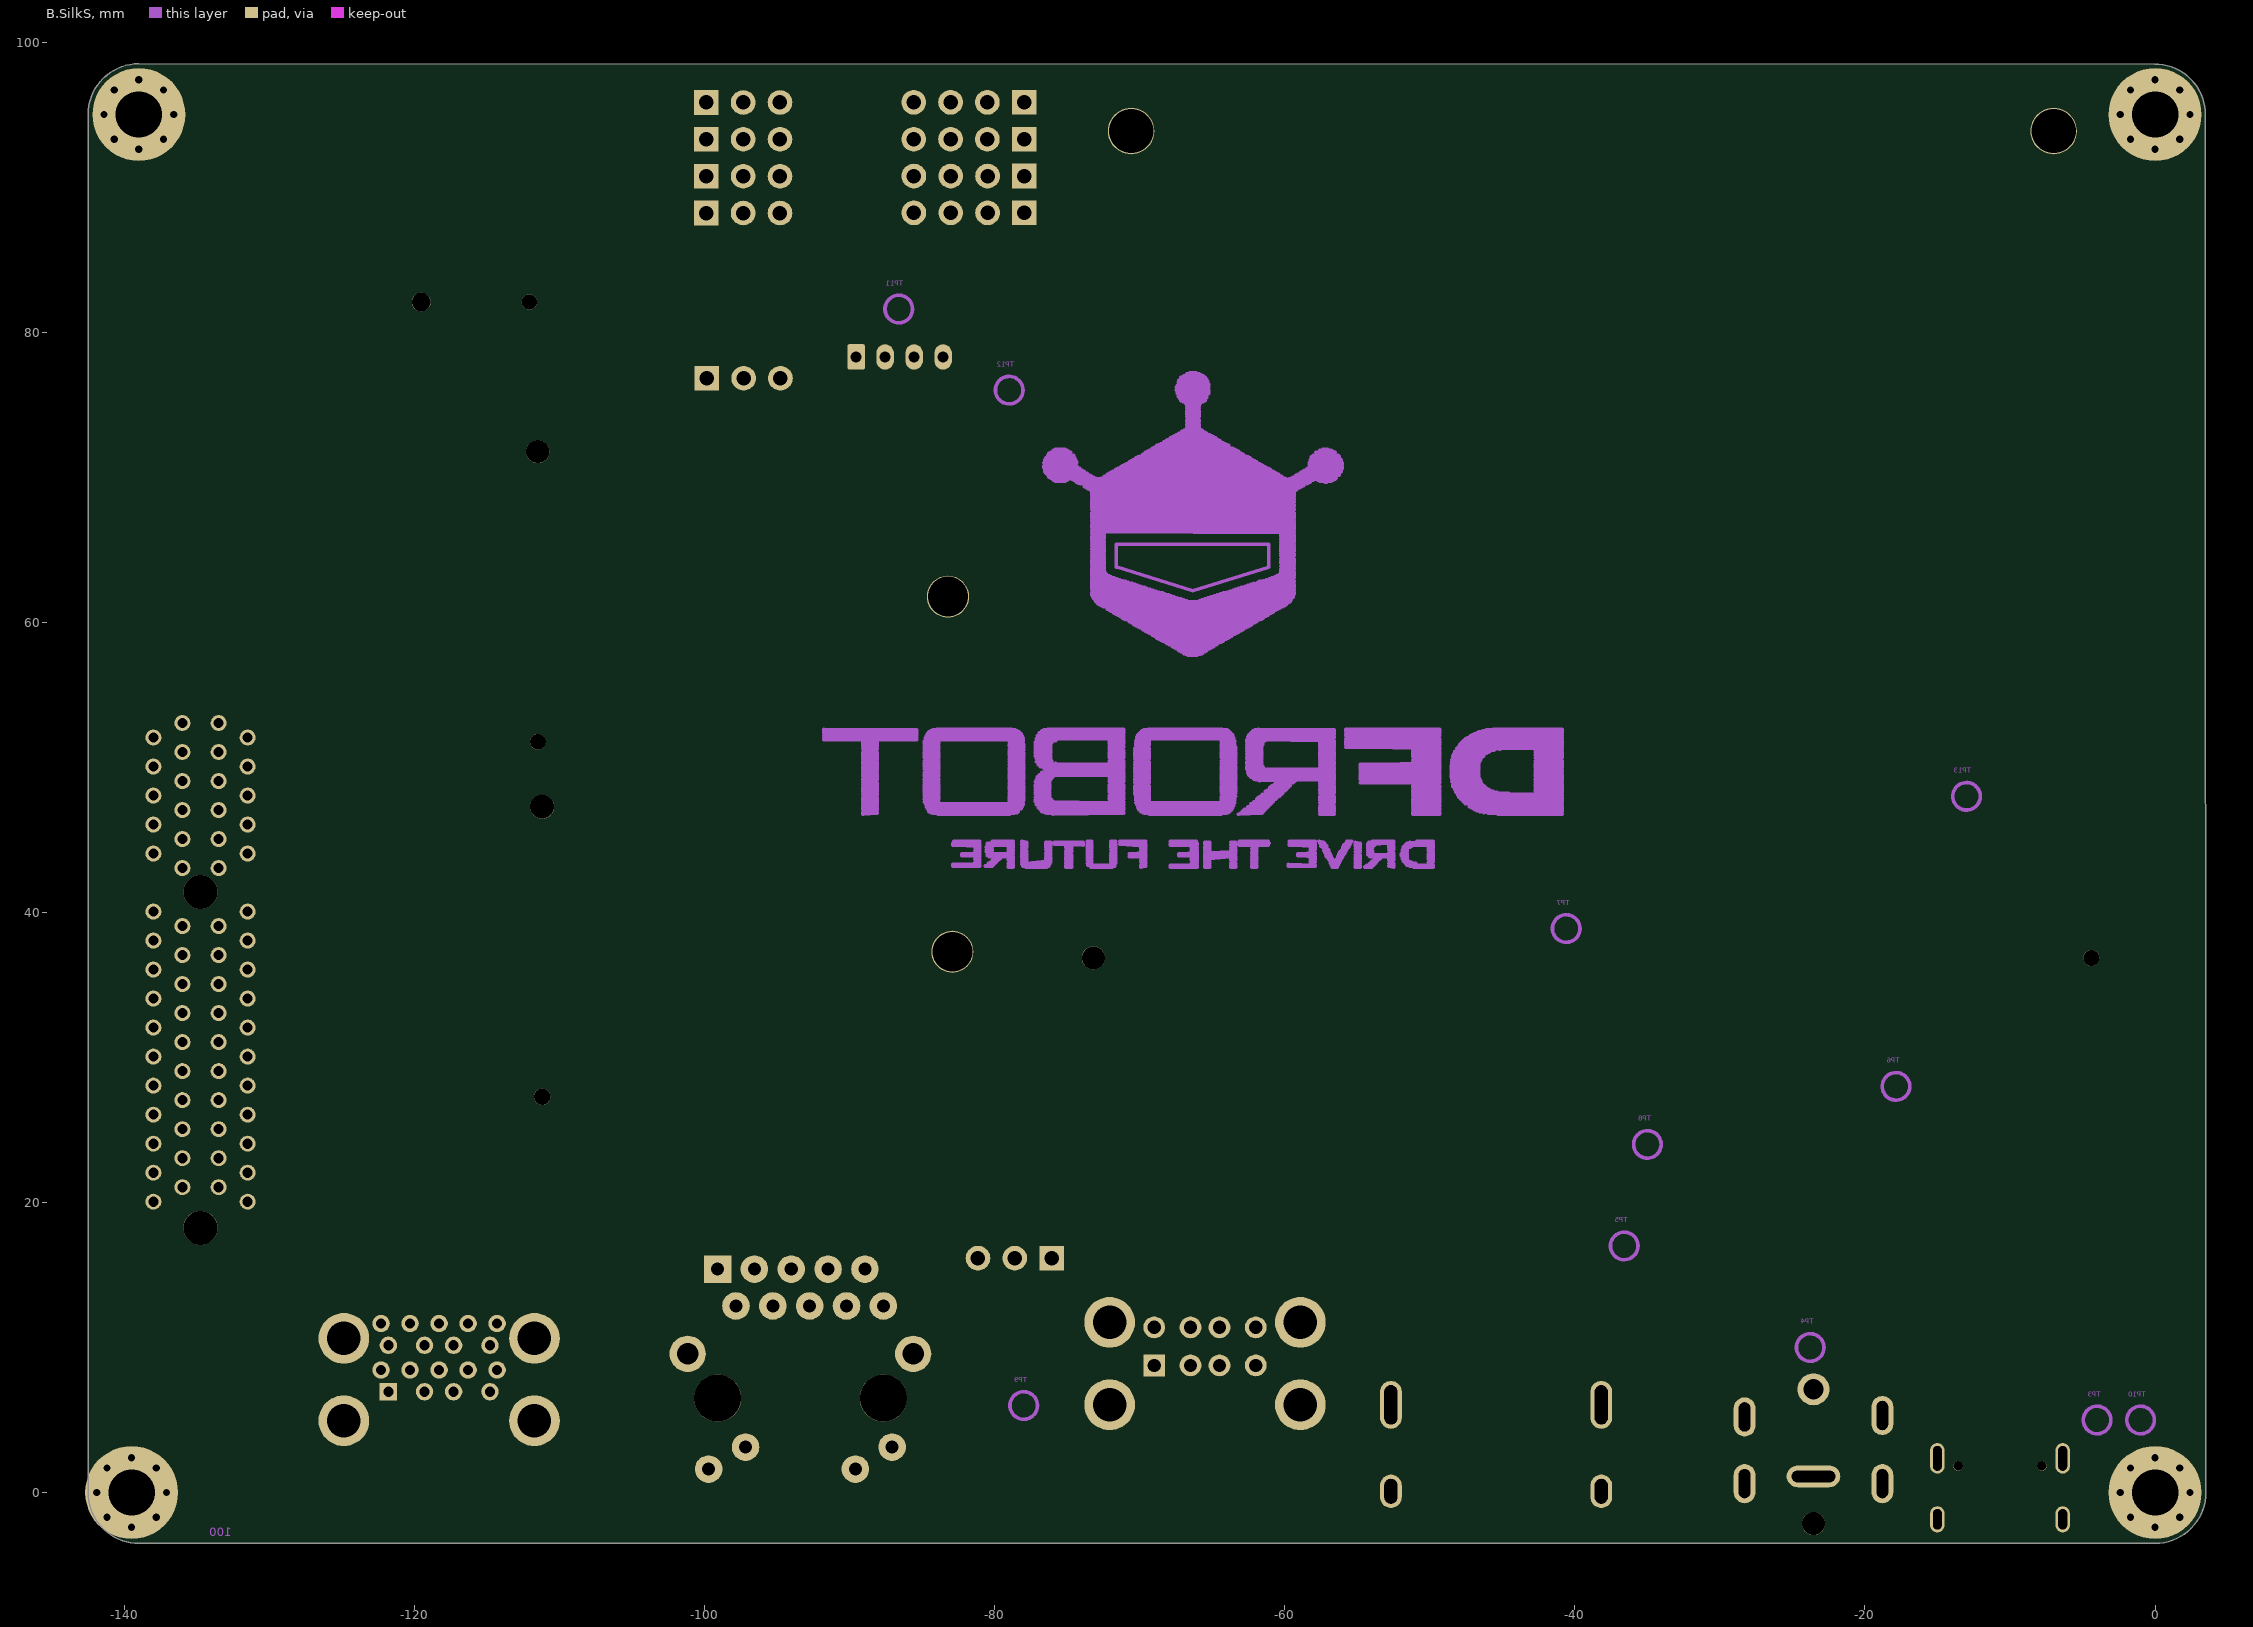
[diagram p7: B.SilkS]
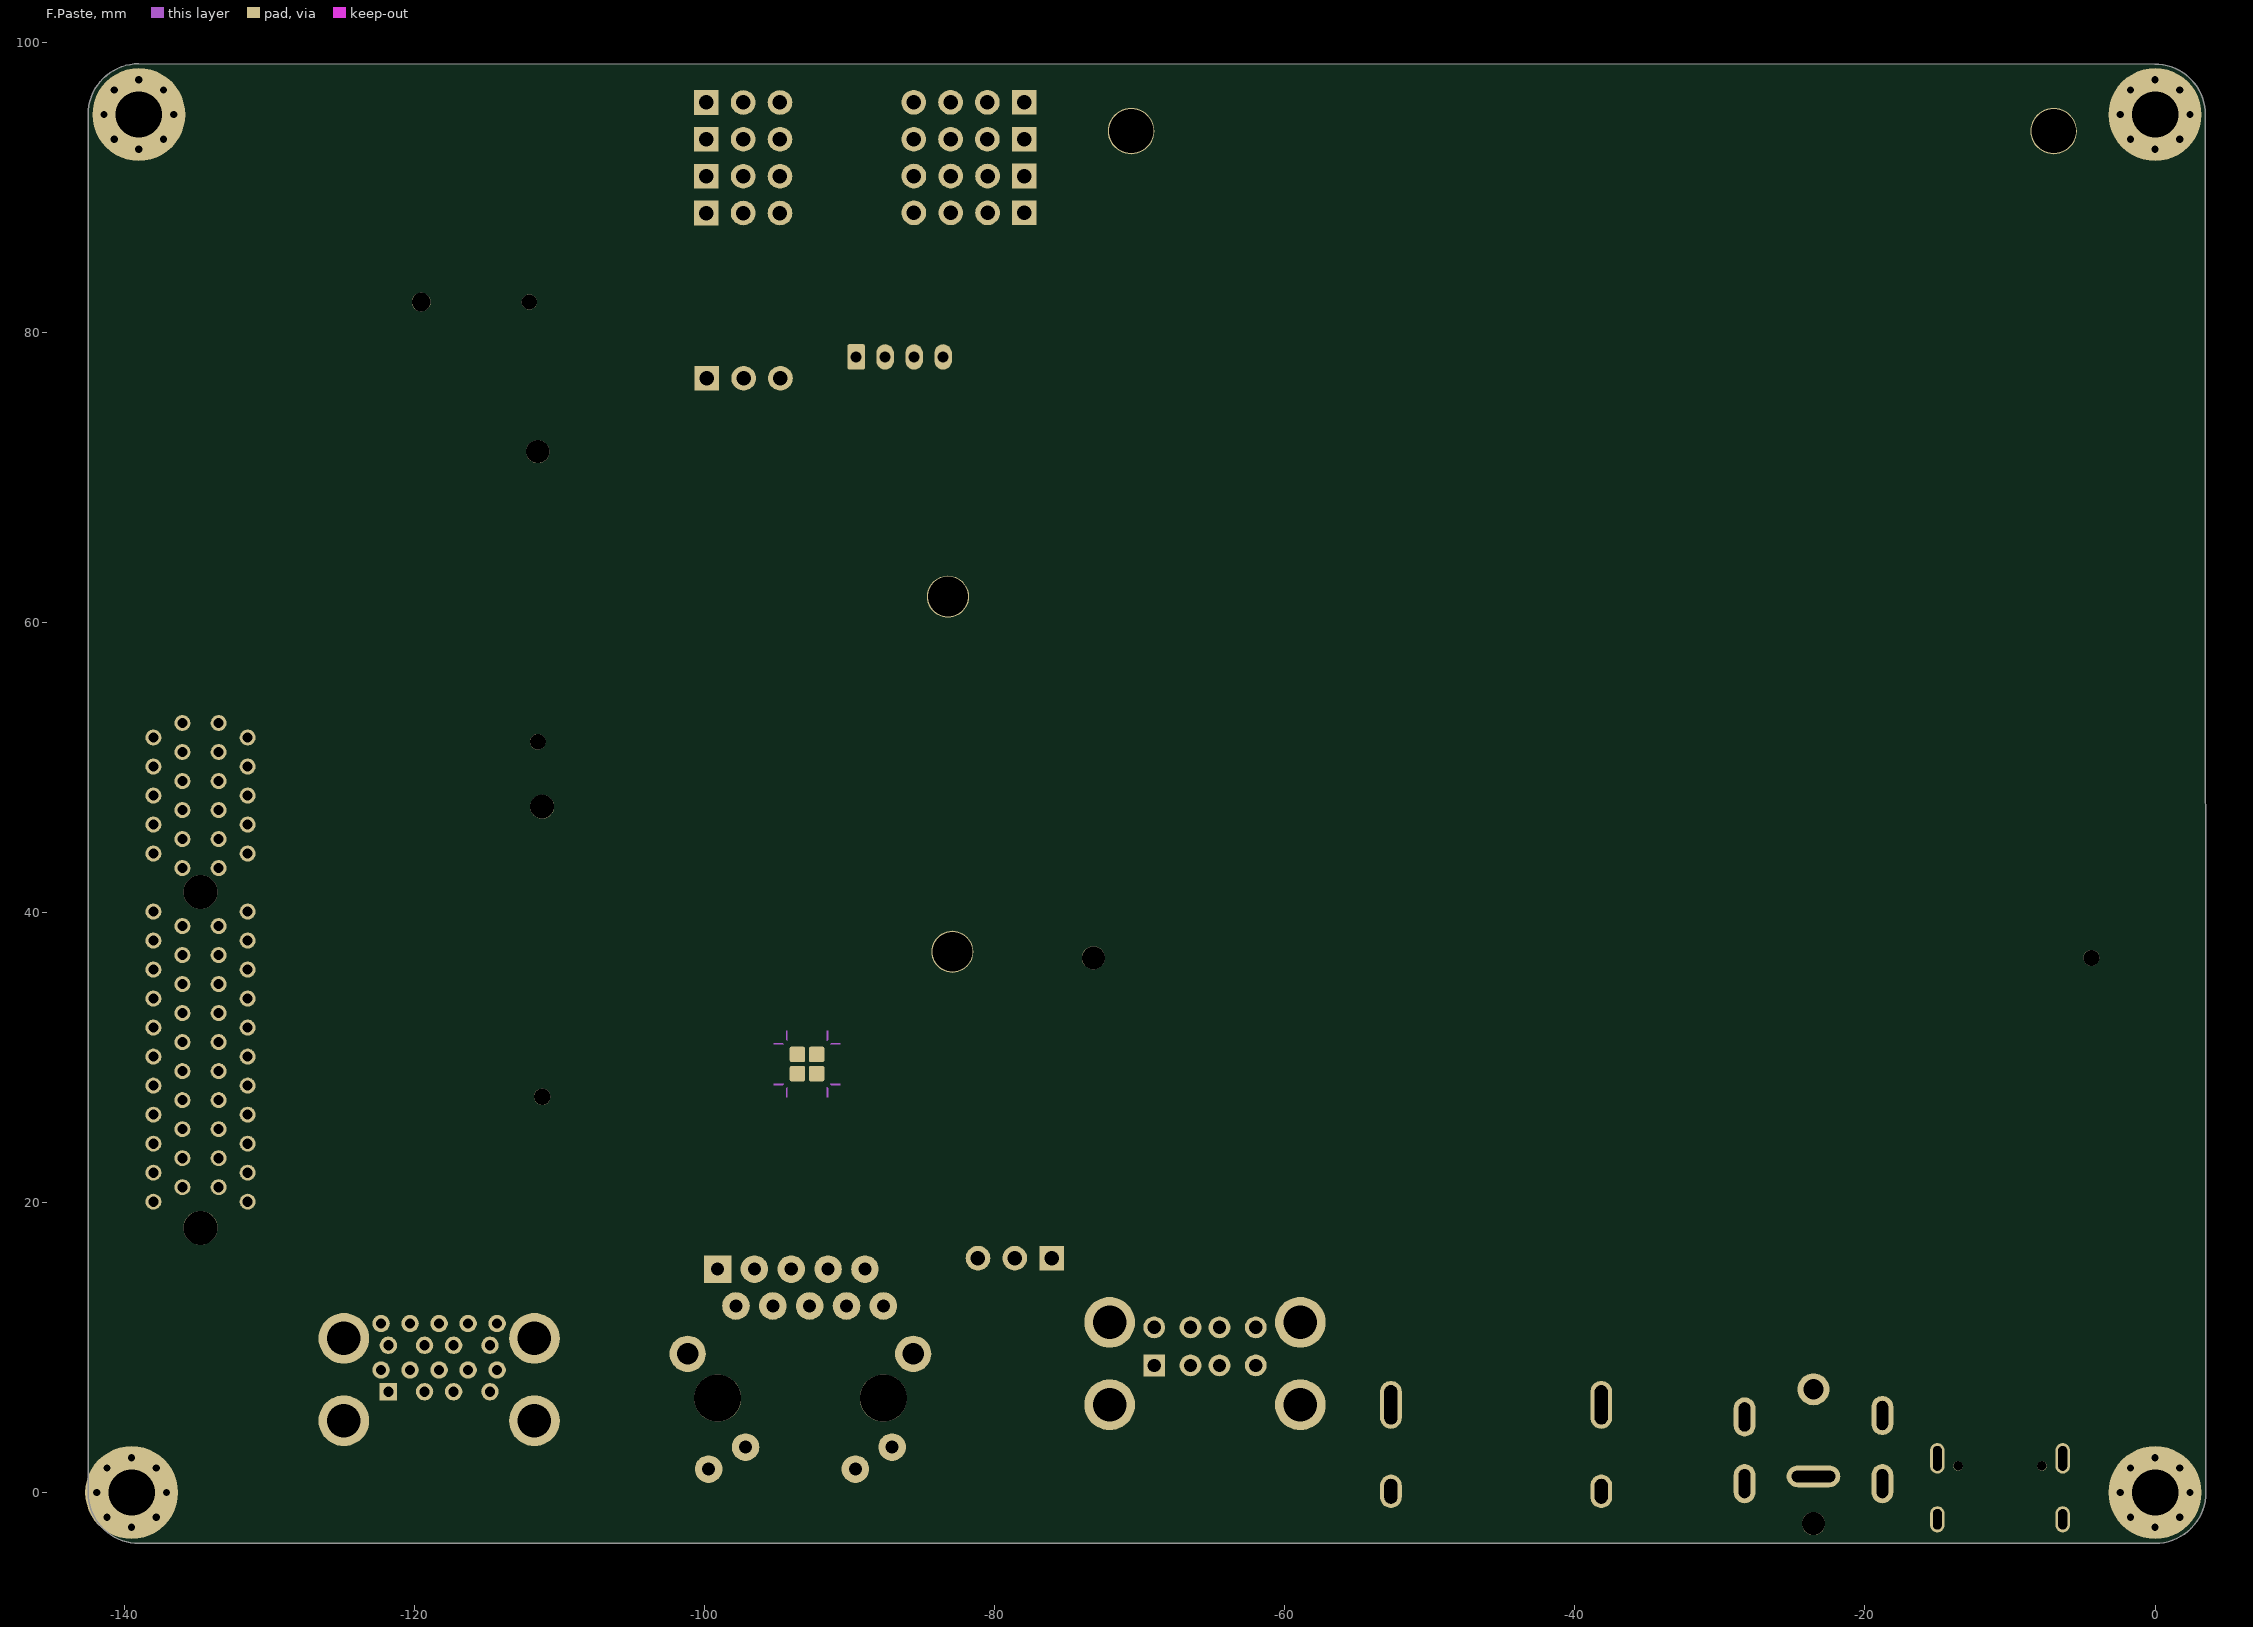
[diagram p8: F.Paste]
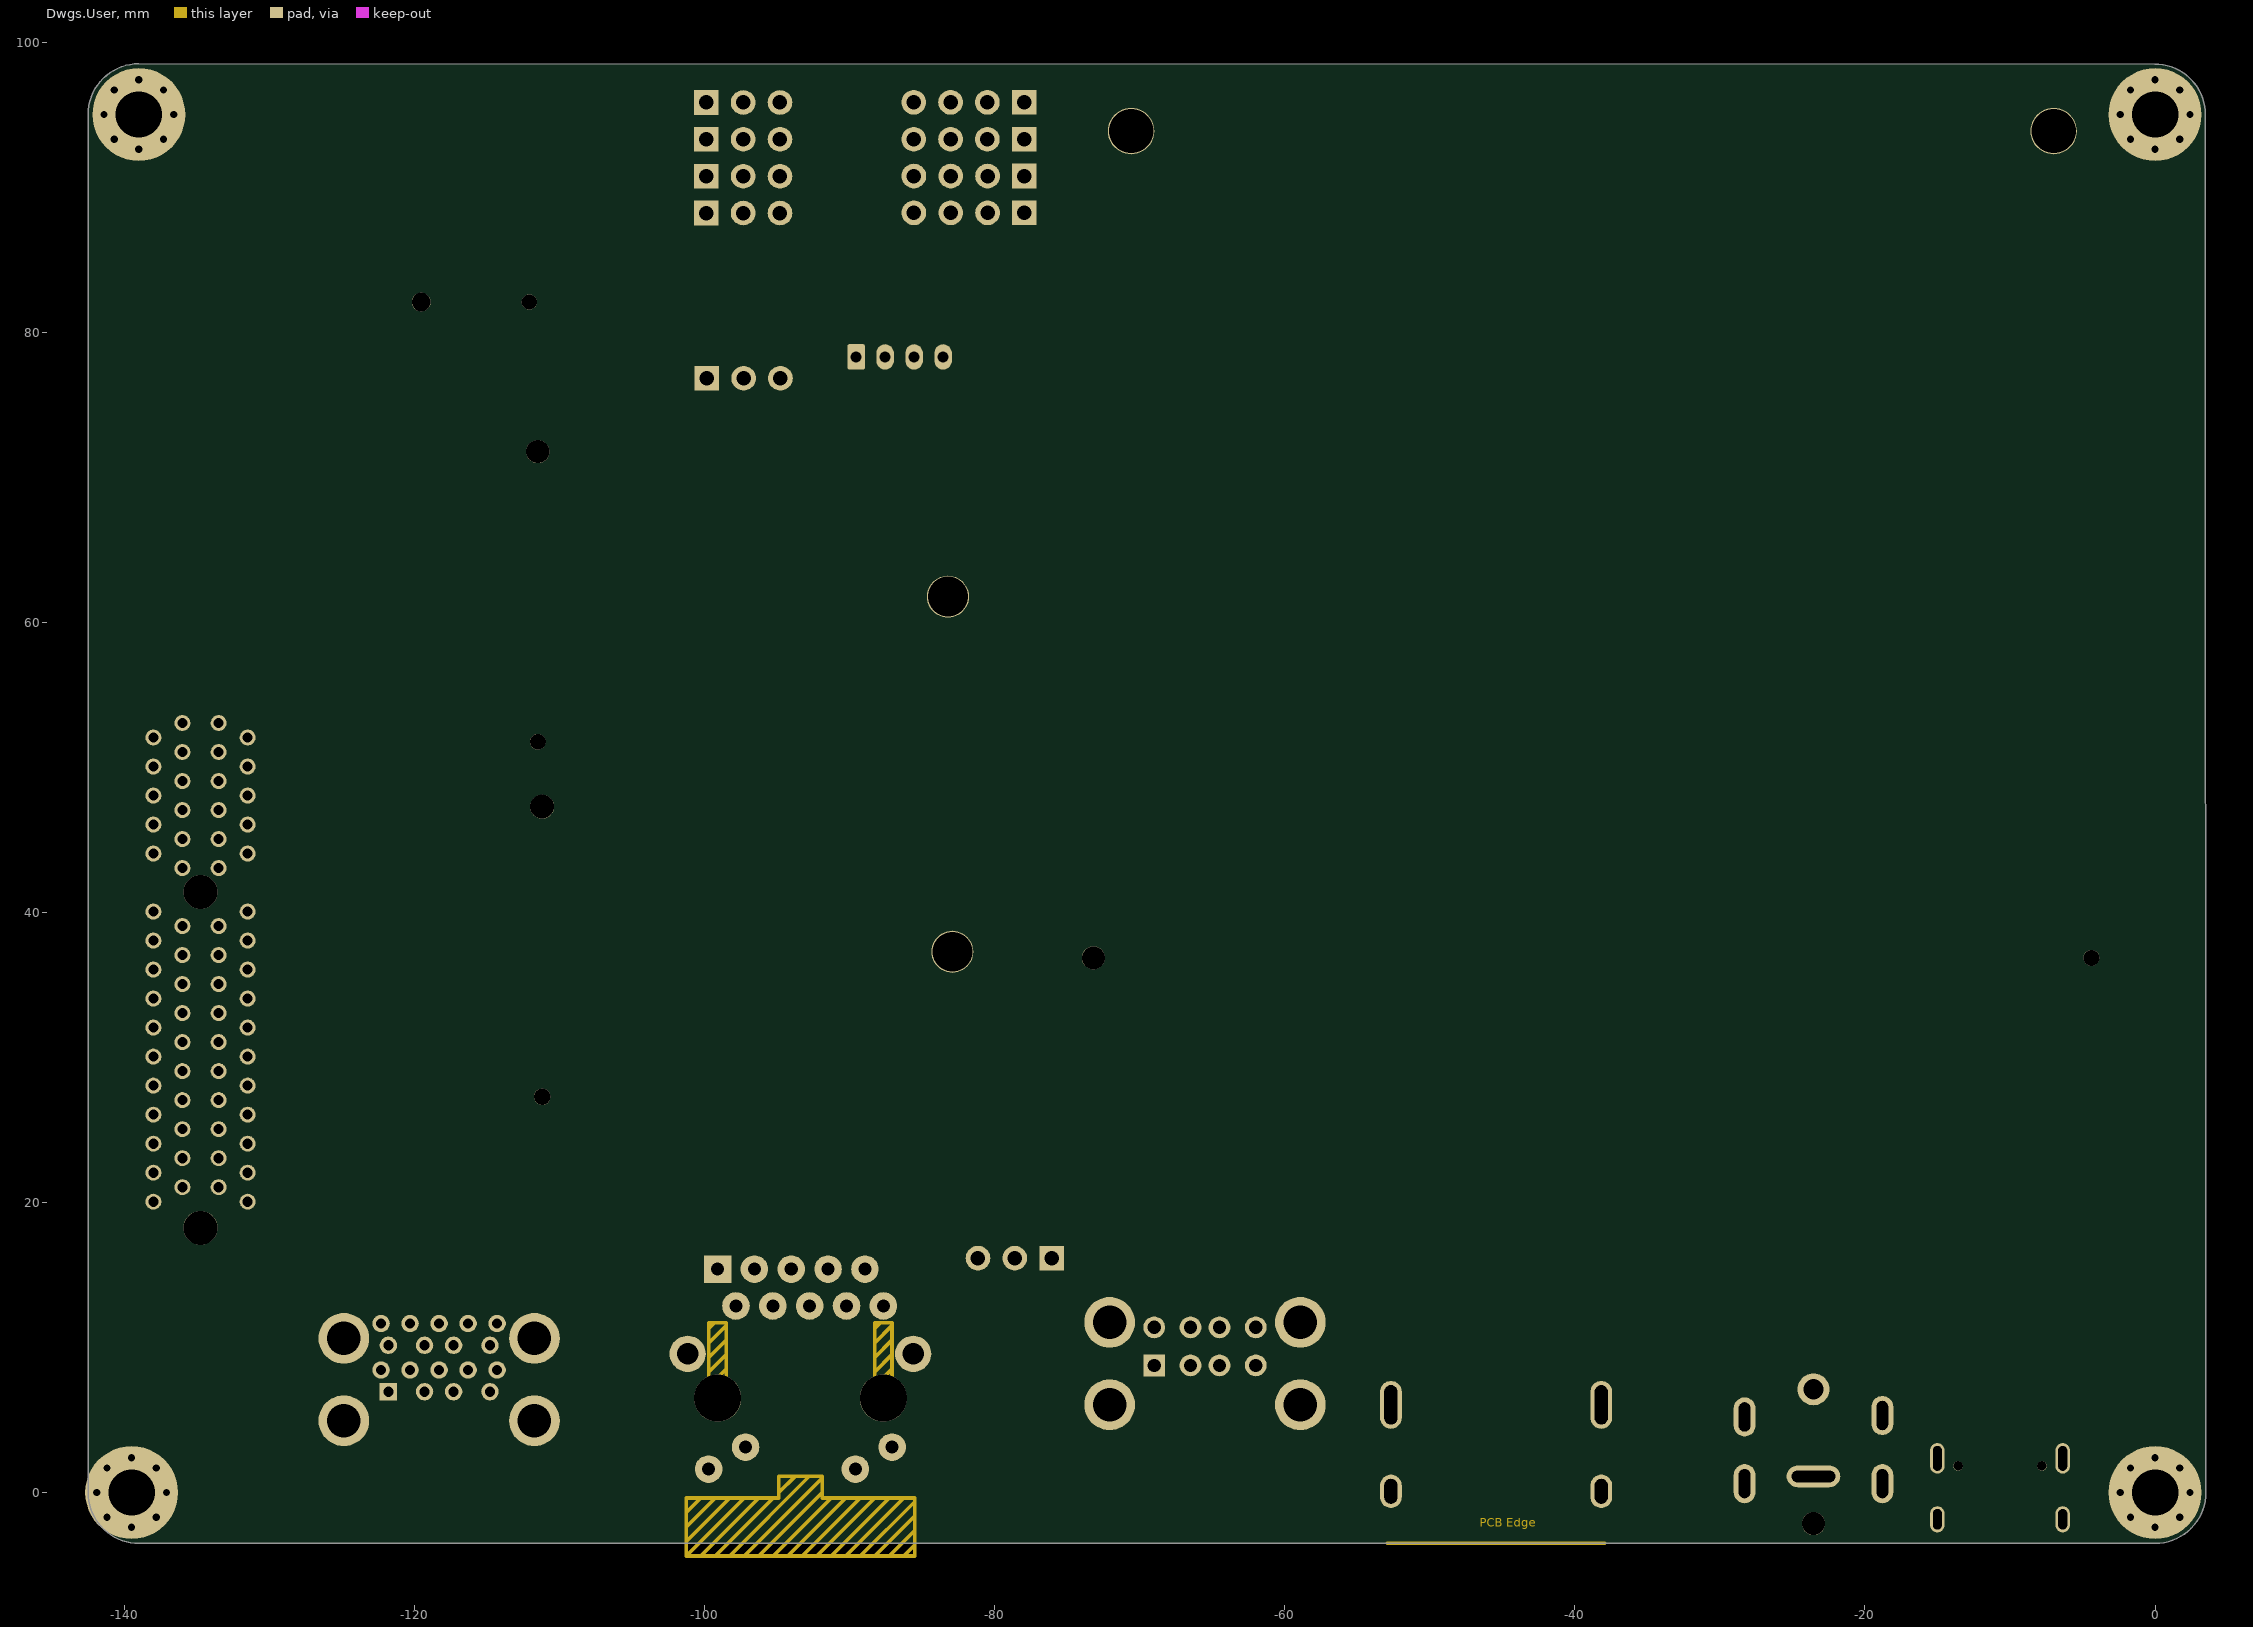
[diagram p9: Dwgs.User]
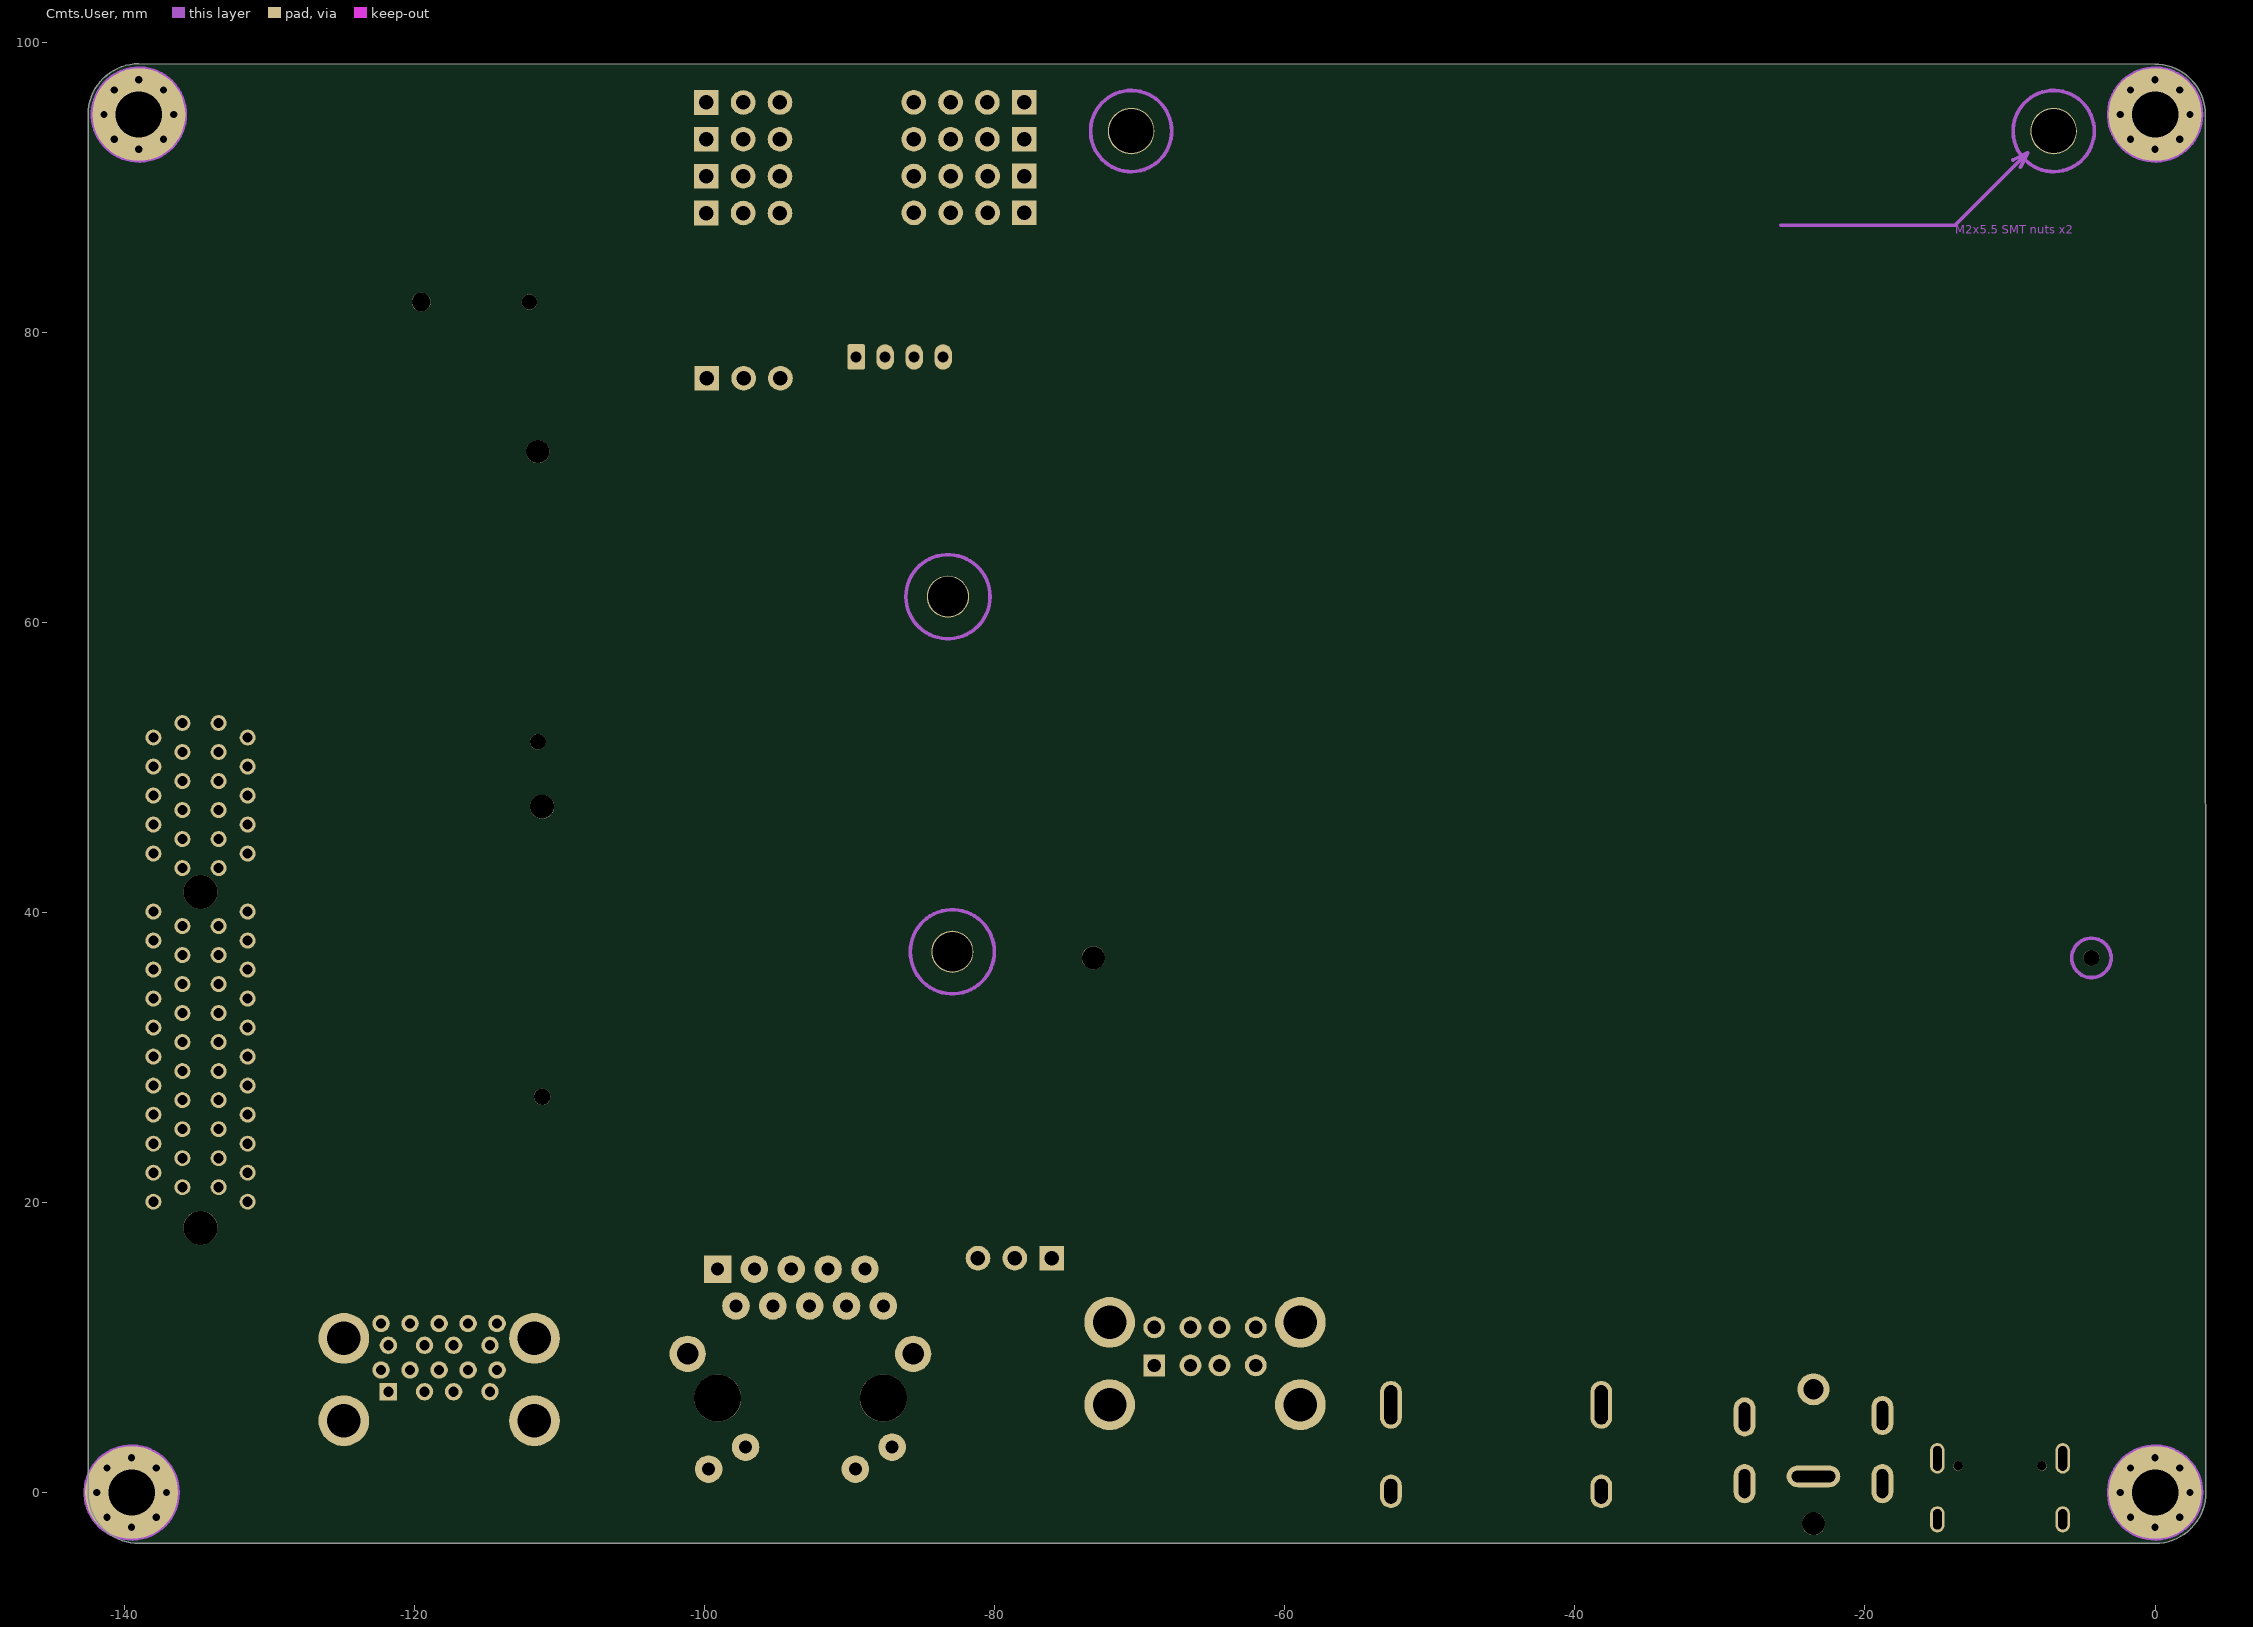
[diagram p10: Cmts.User]
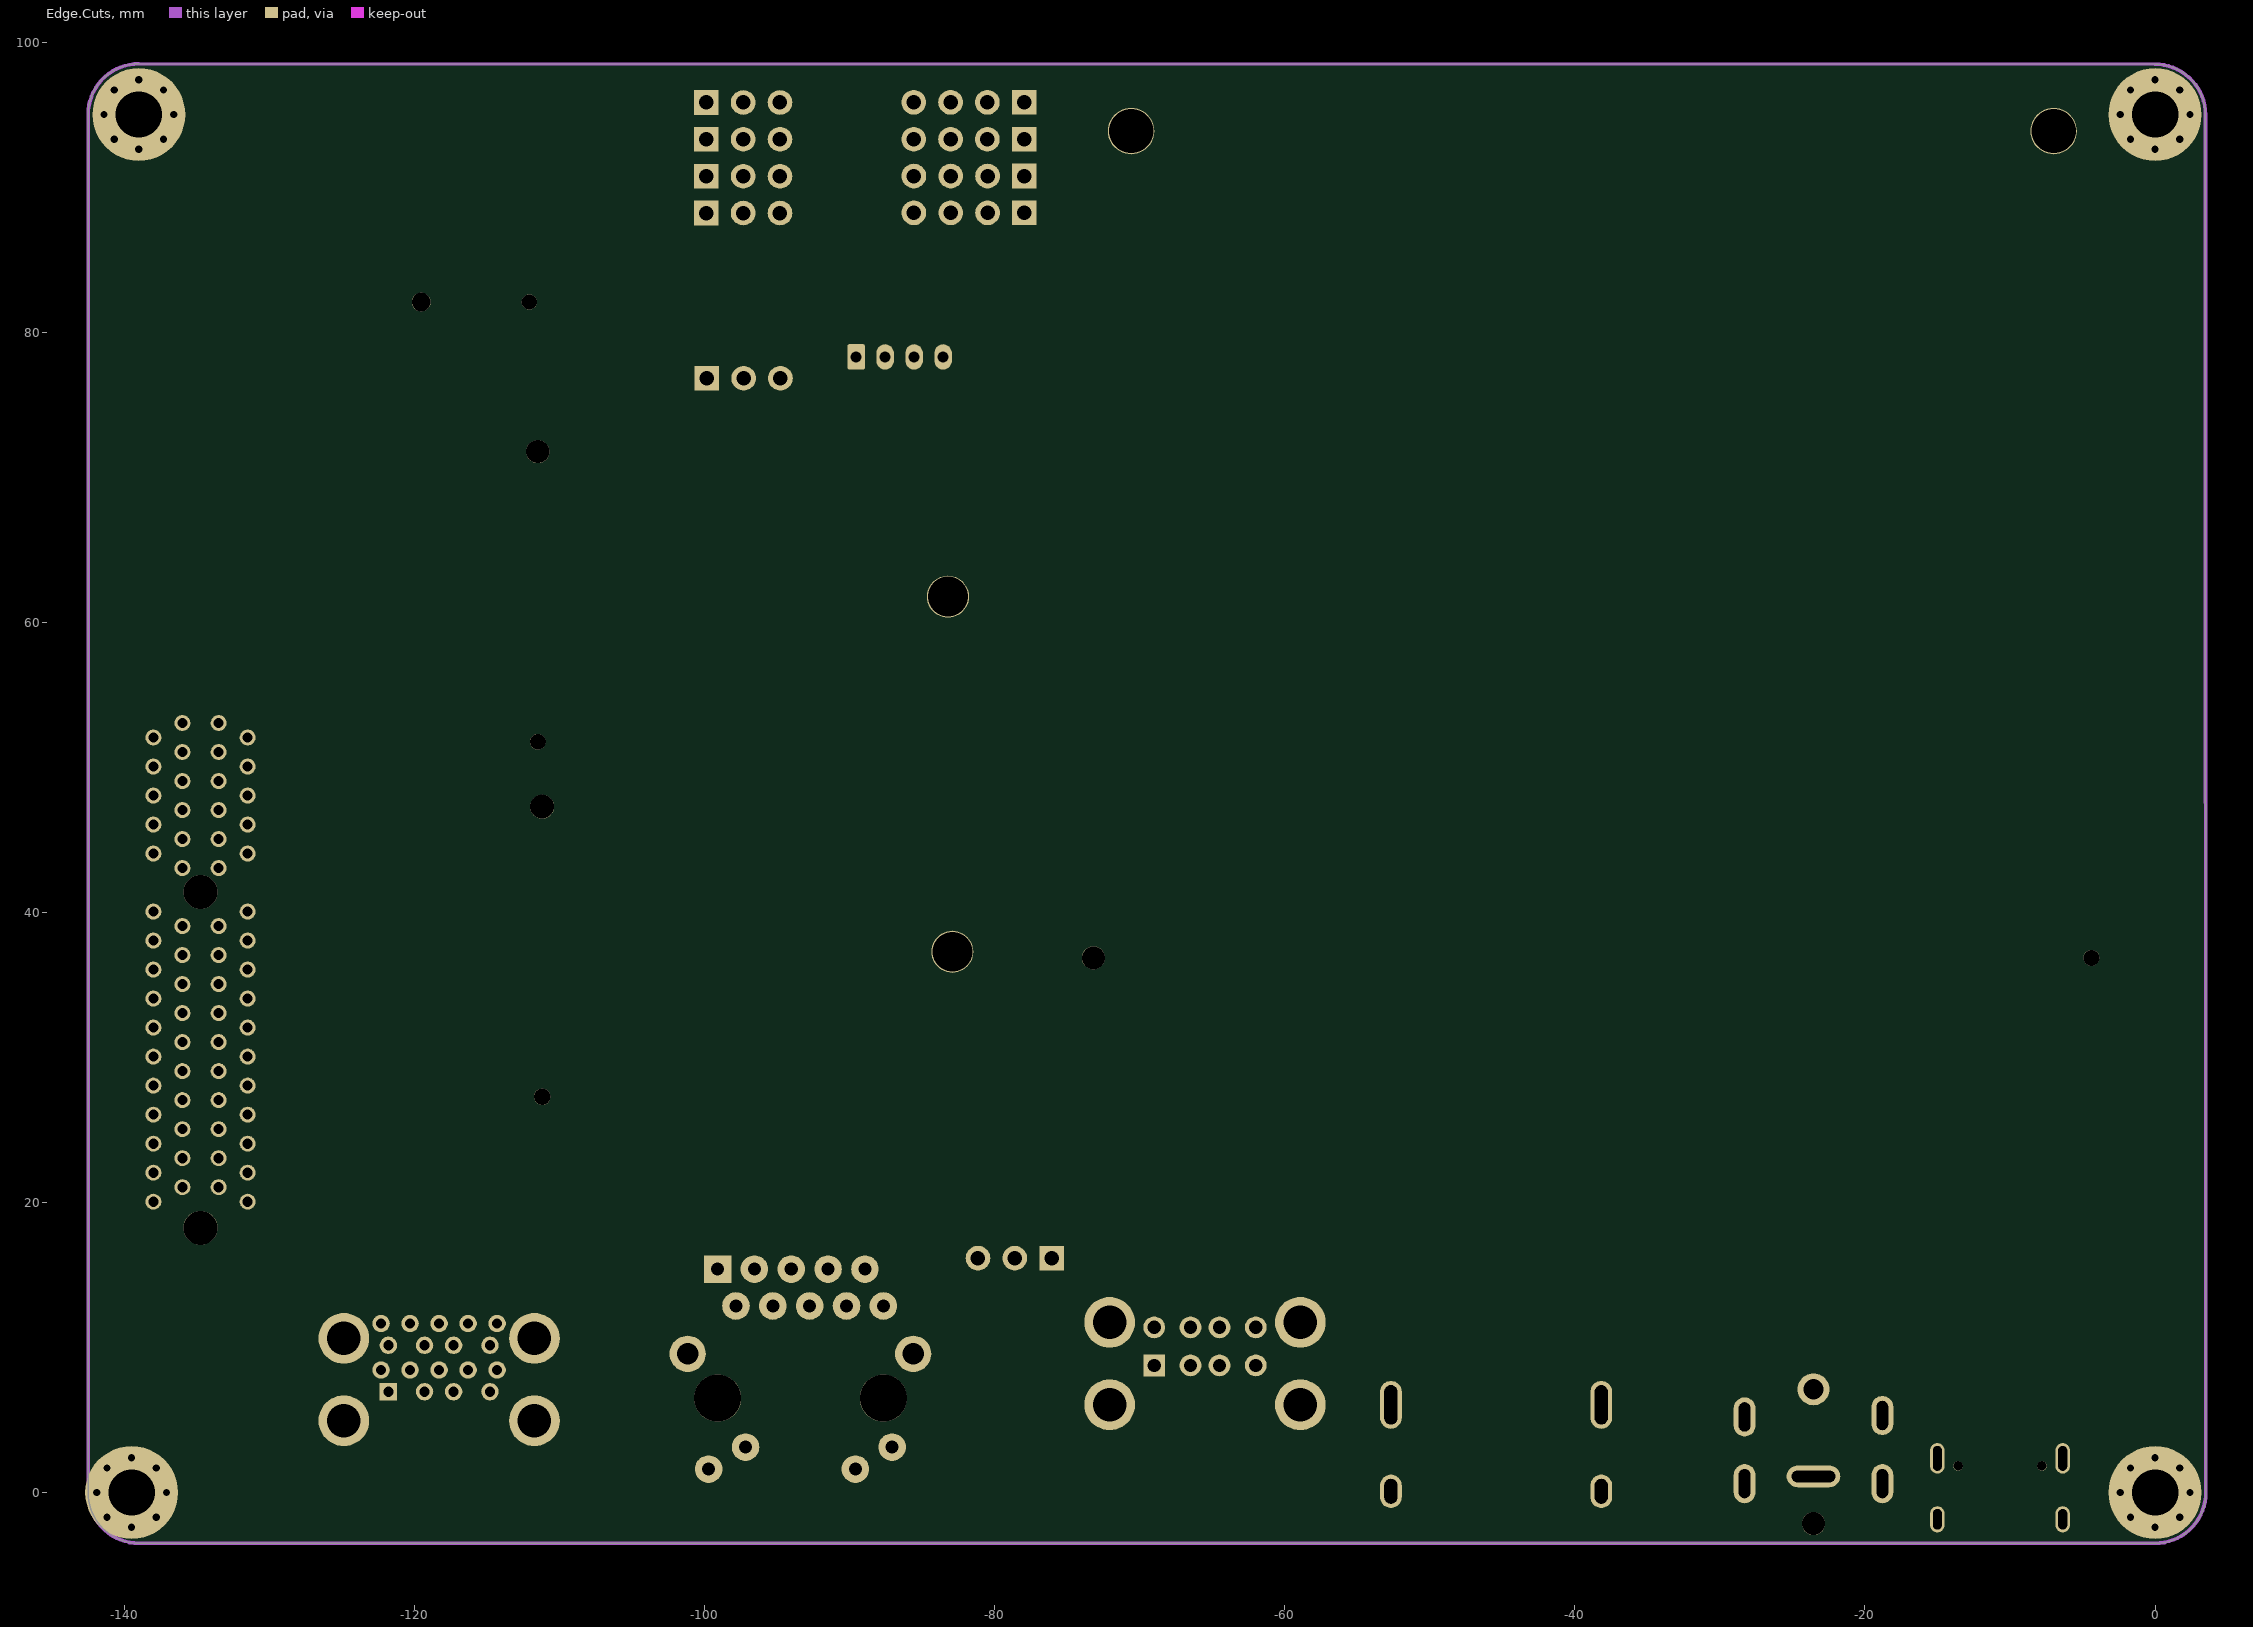
[diagram p11: Edge.Cuts]
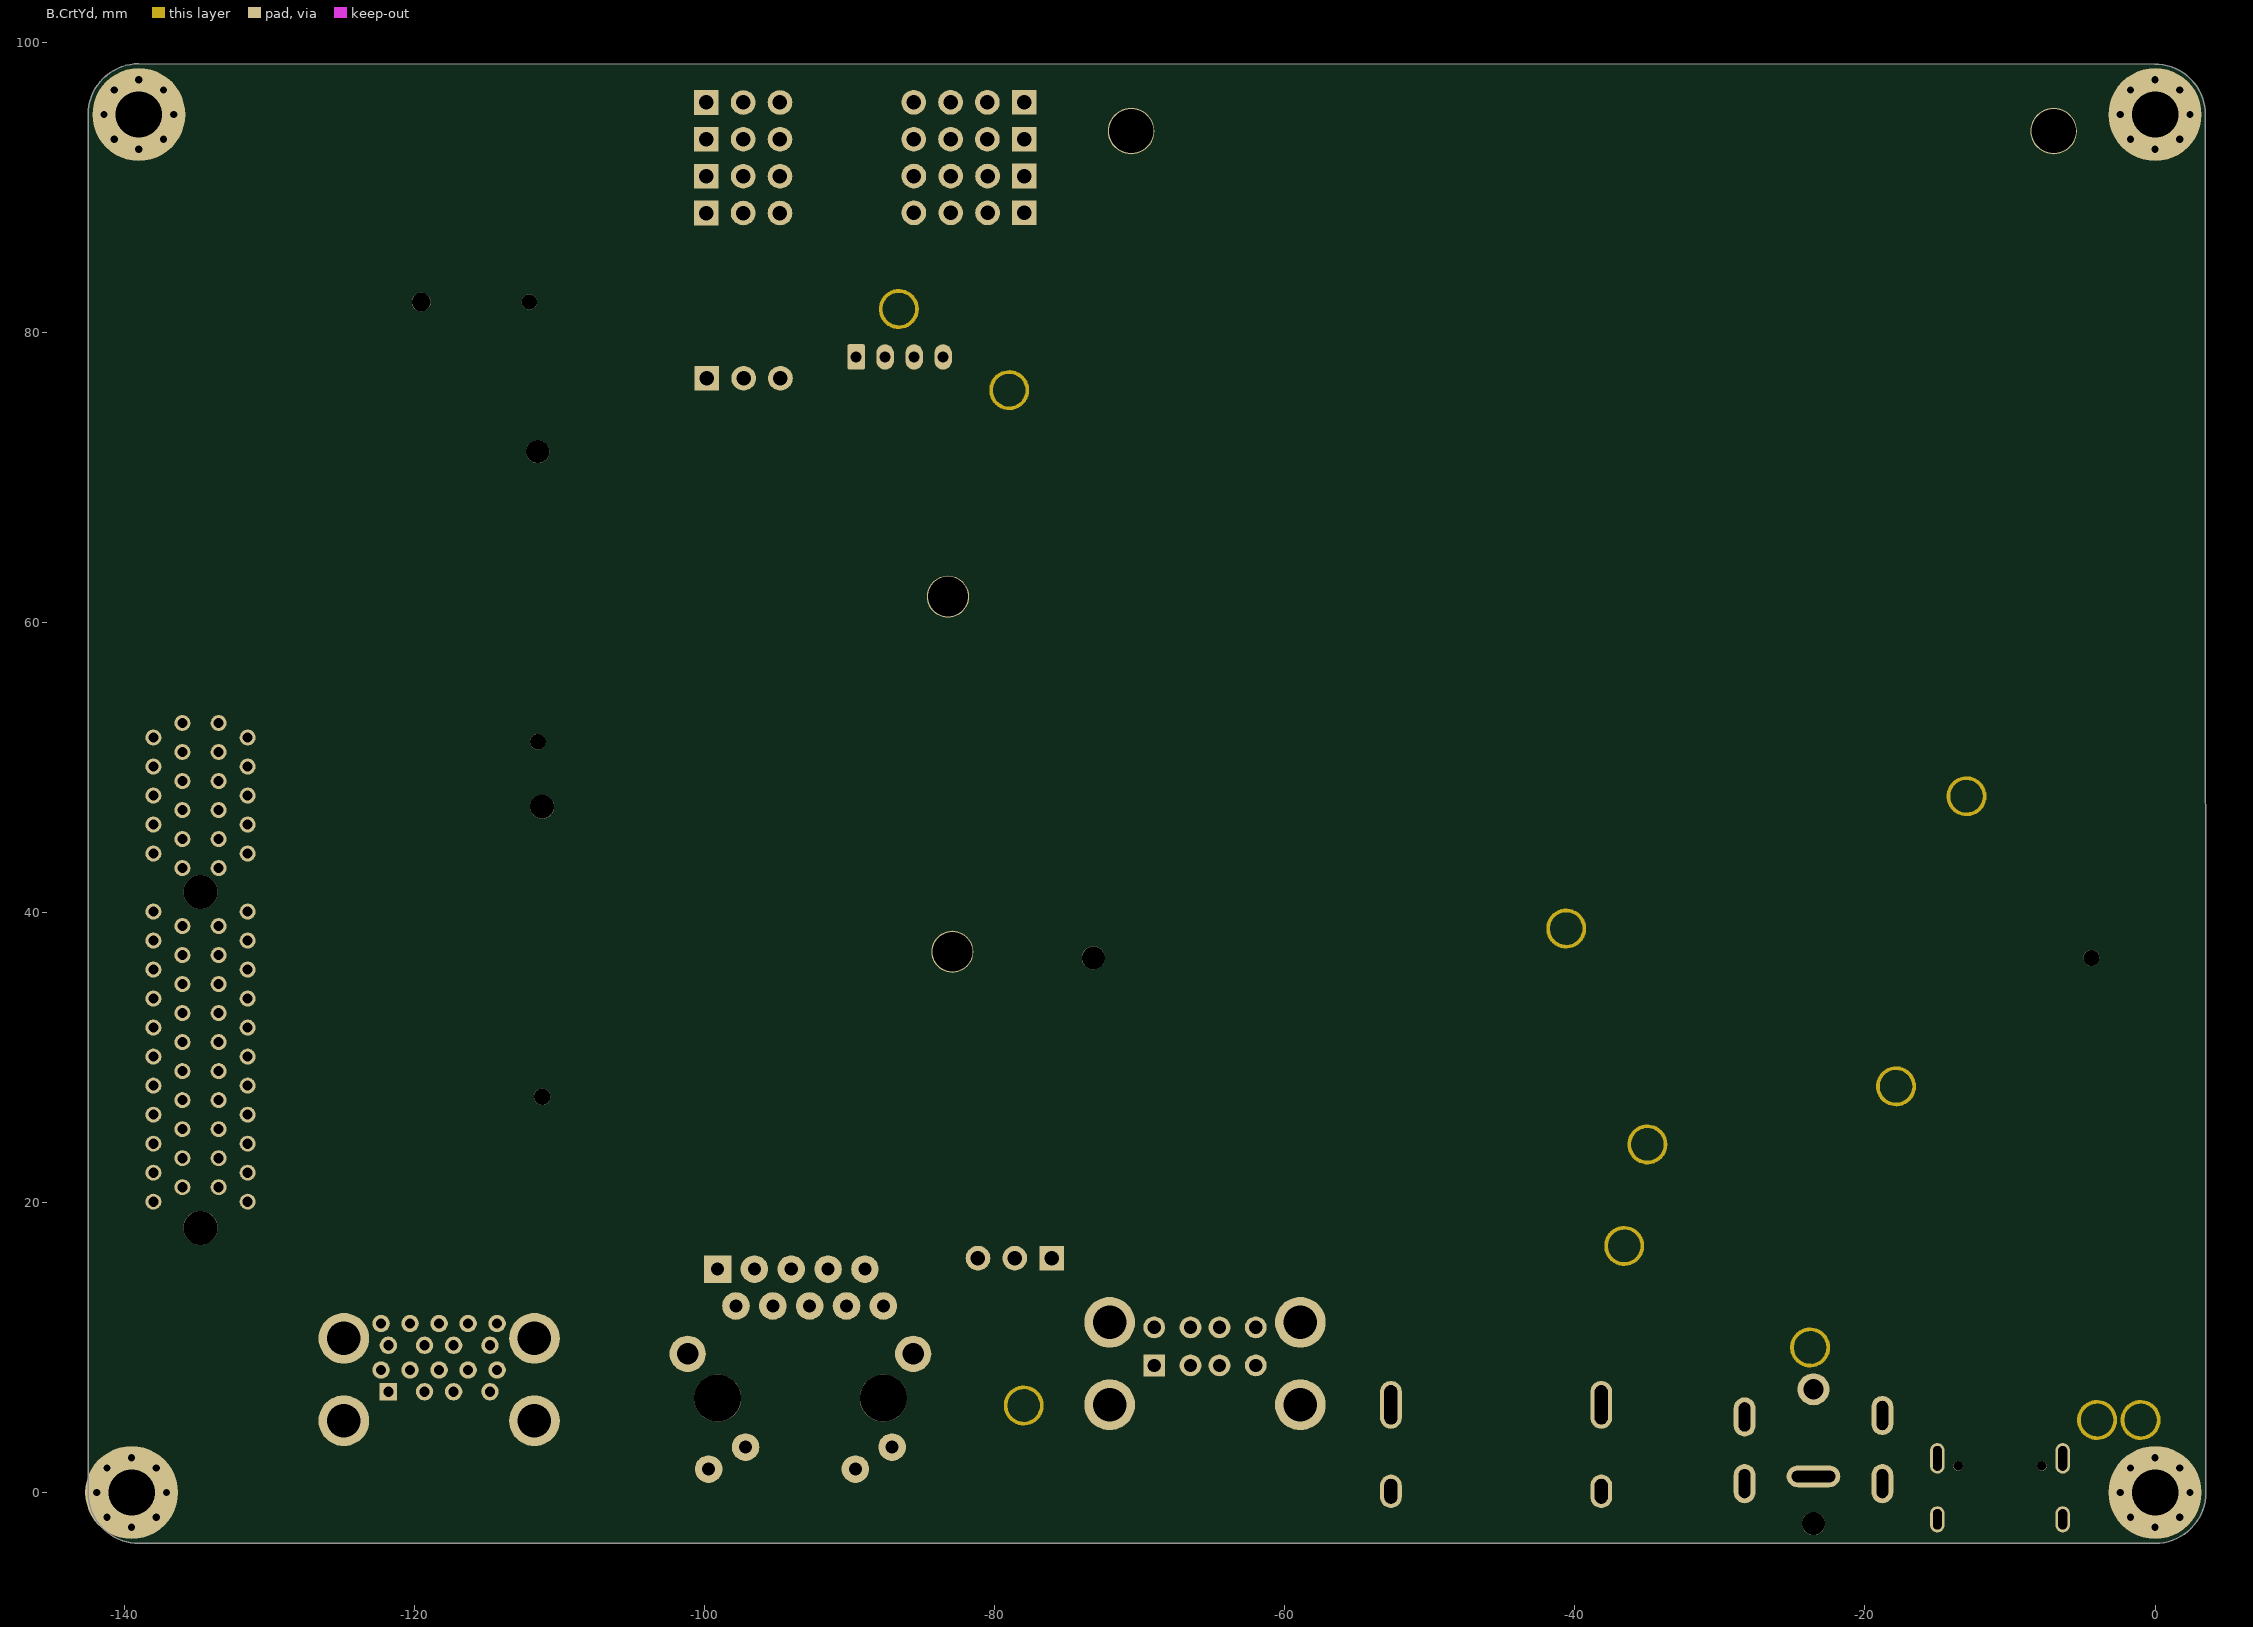
[diagram p12: B.CrtYd]

## Layer stack, top to bottom
Top Solder: solder mask 0.0102, Solder Resist, Dk 3.5
F.Cu: signal copper 0.0356
Dielectric 1: dielectric 0.32, FR-4, Dk 4.8
F.Mask: signal copper 0.0356
Dielectric2: dielectric 0.32, FR-4, Dk 4.8
B.Cu: signal copper 0.0356
Dielectric3: dielectric 0.32, FR-4, Dk 4.8
B.Mask: signal copper 0.0356
Dielectric4: dielectric 0.32, FR-4, Dk 4.8
In1.Cu: signal copper 0.0356
Dielectric5: dielectric 0.32, FR-4, Dk 4.8
F.SilkS: signal copper 0.0356
Dielectric6: dielectric 0.32, FR-4, Dk 4.8
In2.Cu: signal copper 0.0356
Dielectric7: dielectric 0.32, FR-4, Dk 4.8
B.SilkS: signal copper 0.0356
Dielectric8: dielectric 0.32, FR-4, Dk 4.8
F.Adhes: signal copper 0.0356
Dielectric9: dielectric 0.32, FR-4, Dk 4.8
B.Adhes: signal copper 0.0356
Dielectric10: dielectric 0.32, FR-4, Dk 4.8
F.Paste: signal copper 0.0356
Dielectric11: dielectric 0.32, FR-4, Dk 4.8
B.Paste: signal copper 0.0356
Dielectric12: dielectric 0.32, FR-4, Dk 4.8
Dwgs.User: signal copper 0.0356
Dielectric13: dielectric 0.32, FR-4, Dk 4.8
Cmts.User: signal copper 0.0356
Dielectric14: dielectric 0.32, FR-4, Dk 4.8
Eco1.User: signal copper 0.0356
Dielectric15: dielectric 0.32, FR-4, Dk 4.8
Eco2.User: signal copper 0.0356
Dielectric16: dielectric 0.32, FR-4, Dk 4.8
Edge.Cuts: signal copper 0.0356
Dielectric17: dielectric 0.32, FR-4, Dk 4.8
Margin: signal copper 0.0356
Dielectric18: dielectric 0.32, FR-4, Dk 4.8
B.CrtYd: signal copper 0.0356
Dielectric19: dielectric 0.32, FR-4, Dk 4.8
F.CrtYd: signal copper 0.0356
Bottom Solder: solder mask 0.0102, Solder Resist, Dk 3.5

## Board outline
-142.5,0 ccw(c-139,0) -139,-3.5 0,-3.5 ccw(c0,0) 3.5,0 3.475,94.975 ccw(c-0.025,94.975) -0.025,98.475 -139,98.5 ccw(c-139,95) -142.5,95

## Design rules (kind name [scope] priority, off if disabled: settings)
Clearance "Clearence 0.6_Polygon" [InNamedPolygon('F.Cu-GND-192') OR InNamedPolygon('B.Cu-GND-1')] p1: gap=0.6 ignorepadtopadclearanceinfootprint=FALSE
Clearance "Clearence 0.25_PadClass" [InPadClass('Pad Class Clearance 0.25')] p2: gap=0.25 ignorepadtopadclearanceinfootprint=FALSE
Clearance "Clearence 0.2_Polygon" [InNamedPolygon('F.Cu-+3V3-14') OR InNamedPolygon('F.Cu-+3V3-20') OR InNamedPolygon('F.Cu-+5V-1') OR InNamedPolygon('F.Cu-Net-(U16-SW)') OR InNamedPolygon('F.Cu-VDC') OR InNamedPolygon('F.Cu-Net-(U15-SW)') OR InNamedPolygon('F.Cu-+12VA') OR InNamedPolygon('F.Cu-+15V-1') OR InNamedPolygon('F.Cu-+15V-2') OR InNamedPolygon('F.Cu-VDC-1') OR InNamedPolygon('F.Cu-+12V-3') OR InNamedPolygon('F.Cu-Net-(U16-SW)-1') OR InNamedPolygon('F.Cu-+5V-11') OR InNamedPolygon('F.Cu-VDC-3') OR InNamedPolygon('F.Cu-GND-191') OR InNamedPolygon('B.Cu-GND') OR InNamedPolygon('F.Cu-+5V-13') OR InNamedPolygon('B.Cu-+5V') OR InNamedPolygon('F.Cu-+12VA-2') OR InNamedPolygon('B.Cu-+12VA') OR InNamedPolygon('F.Cu-+3V3-78') OR InNamedPolygon('In2.Cu-+3V3') OR InNamedPolygon('F.Cu-+3V3-79') OR InNamedPolygon('In2.Cu-+3V3-1') OR InNamedPolygon('B.Cu-+15V') OR InNamedPolygon('B.Cu-+3V3-3') OR InNamedPolygon('B.Cu-+5V-1') OR InNamedPolygon('B.Cu-VDC-1') OR InNamedPolygon('B.Cu-+12VA-1') OR InNamedPolygon('B.Cu-+3V3-15') OR InNamedPolygon('In2.Cu-+3V3-2') OR InNamedPolygon('In1.Cu-GND-2') OR InNamedPolygon('In2.Cu-GND') OR InNamedPolygon('In2.Cu-+3V3-8')] p3: gap=0.2 ignorepadtopadclearanceinfootprint=FALSE
MinimumSolderMaskSliver [All] p1: minsoldermaskwidth=0
PolygonConnect Polygon_In2.Cu-/PSU/PWR_EN-5_ConnectDirect [IsNamedPolygon('In2.Cu-/PSU/PWR_EN-5')] p1: connectstyle=Direct reliefconductorwidth=0.254 reliefentries=4 polygonreliefangle="90 Angle" airgapwidth=0.254
PolygonConnect Polygon_In2.Cu-/Fan_Temp/FAN_1_PWM-1_ConnectDirect [IsNamedPolygon('In2.Cu-/Fan_Temp/FAN_1_PWM-1')] p2: connectstyle=Direct reliefconductorwidth=0.254 reliefentries=4 polygonreliefangle="90 Angle" airgapwidth=0.254
PolygonConnect "Polygon_In2.Cu-/LattePanda Module/SUSCLK_WIFI-5_ConnectDirect" [IsNamedPolygon('In2.Cu-/LattePanda Module/SUSCLK_WIFI-5')] p3: connectstyle=Direct reliefconductorwidth=0.254 reliefentries=4 polygonreliefangle="90 Angle" airgapwidth=0.254
PolygonConnect Polygon_In2.Cu-/GPIO/I2C3_SCL-1_ConnectDirect [IsNamedPolygon('In2.Cu-/GPIO/I2C3_SCL-1')] p4: connectstyle=Direct reliefconductorwidth=0.254 reliefentries=4 polygonreliefangle="90 Angle" airgapwidth=0.254
PolygonConnect Polygon_In2.Cu-Net-(A1-SIO_UART_RX)-1_ConnectDirect [IsNamedPolygon('In2.Cu-Net-(A1-SIO_UART_RX)-1')] p5: connectstyle=Direct reliefconductorwidth=0.254 reliefentries=4 polygonreliefangle="90 Angle" airgapwidth=0.254
PolygonConnect Polygon_In2.Cu-/GPIO/I2C2_SCL-1_ConnectDirect [IsNamedPolygon('In2.Cu-/GPIO/I2C2_SCL-1')] p6: connectstyle=Direct reliefconductorwidth=0.254 reliefentries=4 polygonreliefangle="90 Angle" airgapwidth=0.254
PolygonConnect "Polygon_In2.Cu-/LattePanda Module/SUSCLK_WIFI-4_ConnectDirect" [IsNamedPolygon('In2.Cu-/LattePanda Module/SUSCLK_WIFI-4')] p7: connectstyle=Direct reliefconductorwidth=0.254 reliefentries=4 polygonreliefangle="90 Angle" airgapwidth=0.254
PolygonConnect Polygon_In2.Cu-/~{PWR_LED}{slash}~{PSON}-3_ConnectDirect [IsNamedPolygon('In2.Cu-/~{PWR_LED}{slash}~{PSON}-3')] p8: connectstyle=Direct reliefconductorwidth=0.254 reliefentries=4 polygonreliefangle="90 Angle" airgapwidth=0.254
PolygonConnect Polygon_In2.Cu-/GPIO/I2C3_SCL_ConnectDirect [IsNamedPolygon('In2.Cu-/GPIO/I2C3_SCL')] p9: connectstyle=Direct reliefconductorwidth=0.254 reliefentries=4 polygonreliefangle="90 Angle" airgapwidth=0.254
PolygonConnect Polygon_In2.Cu-/~{WAKE}-3_ConnectDirect [IsNamedPolygon('In2.Cu-/~{WAKE}-3')] p10: connectstyle=Direct reliefconductorwidth=0.254 reliefentries=4 polygonreliefangle="90 Angle" airgapwidth=0.254
PolygonConnect Polygon_In2.Cu-/GPIO/SOC_UART2_TX-1_ConnectDirect [IsNamedPolygon('In2.Cu-/GPIO/SOC_UART2_TX-1')] p11: connectstyle=Direct reliefconductorwidth=0.254 reliefentries=4 polygonreliefangle="90 Angle" airgapwidth=0.254
PolygonConnect Polygon_In2.Cu-/~{PWR_LED}{slash}~{PSON}-2_ConnectDirect [IsNamedPolygon('In2.Cu-/~{PWR_LED}{slash}~{PSON}-2')] p12: connectstyle=Direct reliefconductorwidth=0.254 reliefentries=4 polygonreliefangle="90 Angle" airgapwidth=0.254
PolygonConnect "Polygon_In2.Cu-/LattePanda Module/~{RST_SW}-1_ConnectDirect" [IsNamedPolygon('In2.Cu-/LattePanda Module/~{RST_SW}-1')] p13: connectstyle=Direct reliefconductorwidth=0.254 reliefentries=4 polygonreliefangle="90 Angle" airgapwidth=0.254
PolygonConnect "Polygon_In2.Cu-/Gigabit Ethernet/LED1_1000-1_ConnectDirect" [IsNamedPolygon('In2.Cu-/Gigabit Ethernet/LED1_1000-1')] p14: connectstyle=Direct reliefconductorwidth=0.254 reliefentries=4 polygonreliefangle="90 Angle" airgapwidth=0.254
PolygonConnect Polygon_In2.Cu-/~{WAKE}-2_ConnectDirect [IsNamedPolygon('In2.Cu-/~{WAKE}-2')] p15: connectstyle=Direct reliefconductorwidth=0.254 reliefentries=4 polygonreliefangle="90 Angle" airgapwidth=0.254
PolygonConnect Polygon_In2.Cu-VPullup-1_ConnectDirect [IsNamedPolygon('In2.Cu-VPullup-1')] p16: connectstyle=Direct reliefconductorwidth=0.254 reliefentries=4 polygonreliefangle="90 Angle" airgapwidth=0.254
PolygonConnect "Polygon_In2.Cu-/Gigabit Ethernet/LED2_ACT-1_ConnectDirect" [IsNamedPolygon('In2.Cu-/Gigabit Ethernet/LED2_ACT-1')] p17: connectstyle=Direct reliefconductorwidth=0.254 reliefentries=4 polygonreliefangle="90 Angle" airgapwidth=0.254
PolygonConnect Polygon_In2.Cu-/GPIO/I2C4_SCL-1_ConnectDirect [IsNamedPolygon('In2.Cu-/GPIO/I2C4_SCL-1')] p18: connectstyle=Direct reliefconductorwidth=0.254 reliefentries=4 polygonreliefangle="90 Angle" airgapwidth=0.254
PolygonConnect "Polygon_In2.Cu-/LattePanda Module/~{RST_SW}_ConnectDirect" [IsNamedPolygon('In2.Cu-/LattePanda Module/~{RST_SW}')] p19: connectstyle=Direct reliefconductorwidth=0.254 reliefentries=4 polygonreliefangle="90 Angle" airgapwidth=0.254
PolygonConnect Polygon_In2.Cu-/Fan_Temp/FAN_1_TAC-1_ConnectDirect [IsNamedPolygon('In2.Cu-/Fan_Temp/FAN_1_TAC-1')] p20: connectstyle=Direct reliefconductorwidth=0.254 reliefentries=4 polygonreliefangle="90 Angle" airgapwidth=0.254
PolygonConnect Polygon_In2.Cu-/~{PLT_RST}-5_ConnectDirect [IsNamedPolygon('In2.Cu-/~{PLT_RST}-5')] p21: connectstyle=Direct reliefconductorwidth=0.254 reliefentries=4 polygonreliefangle="90 Angle" airgapwidth=0.254
PolygonConnect Polygon_In2.Cu-/Fan_Temp/FAN_1_PWM_ConnectDirect [IsNamedPolygon('In2.Cu-/Fan_Temp/FAN_1_PWM')] p22: connectstyle=Direct reliefconductorwidth=0.254 reliefentries=4 polygonreliefangle="90 Angle" airgapwidth=0.254
PolygonConnect Polygon_In2.Cu-+3V3-10_ConnectDirect [IsNamedPolygon('In2.Cu-+3V3-10')] p23: connectstyle=Direct reliefconductorwidth=0.254 reliefentries=4 polygonreliefangle="90 Angle" airgapwidth=0.254
PolygonConnect Polygon_In2.Cu-/~{PWR_LED}{slash}~{PSON}-1_ConnectDirect [IsNamedPolygon('In2.Cu-/~{PWR_LED}{slash}~{PSON}-1')] p24: connectstyle=Direct reliefconductorwidth=0.254 reliefentries=4 polygonreliefangle="90 Angle" airgapwidth=0.254
PolygonConnect Polygon_In2.Cu-/~{PLT_RST}-4_ConnectDirect [IsNamedPolygon('In2.Cu-/~{PLT_RST}-4')] p25: connectstyle=Direct reliefconductorwidth=0.254 reliefentries=4 polygonreliefangle="90 Angle" airgapwidth=0.254
PolygonConnect Polygon_In2.Cu-+3V3-9_ConnectDirect [IsNamedPolygon('In2.Cu-+3V3-9')] p26: connectstyle=Direct reliefconductorwidth=0.254 reliefentries=4 polygonreliefangle="90 Angle" airgapwidth=0.254
PolygonConnect Polygon_In2.Cu-/GPIO/I2C2_SCL_ConnectDirect [IsNamedPolygon('In2.Cu-/GPIO/I2C2_SCL')] p27: connectstyle=Direct reliefconductorwidth=0.254 reliefentries=4 polygonreliefangle="90 Angle" airgapwidth=0.254
PolygonConnect Polygon_In2.Cu-Net-(A1-SIO_UART_TX)-1_ConnectDirect [IsNamedPolygon('In2.Cu-Net-(A1-SIO_UART_TX)-1')] p28: connectstyle=Direct reliefconductorwidth=0.254 reliefentries=4 polygonreliefangle="90 Angle" airgapwidth=0.254
PolygonConnect "Polygon_In2.Cu-/Gigabit Ethernet/LED2_ACT_ConnectDirect" [IsNamedPolygon('In2.Cu-/Gigabit Ethernet/LED2_ACT')] p29: connectstyle=Direct reliefconductorwidth=0.254 reliefentries=4 polygonreliefangle="90 Angle" airgapwidth=0.254
PolygonConnect Polygon_In2.Cu-/GPIO/SOC_UART0_RX-1_ConnectDirect [IsNamedPolygon('In2.Cu-/GPIO/SOC_UART0_RX-1')] p30: connectstyle=Direct reliefconductorwidth=0.254 reliefentries=4 polygonreliefangle="90 Angle" airgapwidth=0.254
PolygonConnect Polygon_In2.Cu-Net-(A1-SIO_UART_RX)_ConnectDirect [IsNamedPolygon('In2.Cu-Net-(A1-SIO_UART_RX)')] p31: connectstyle=Direct reliefconductorwidth=0.254 reliefentries=4 polygonreliefangle="90 Angle" airgapwidth=0.254
PolygonConnect Polygon_In2.Cu-+3V3-8_ConnectDirect [IsNamedPolygon('In2.Cu-+3V3-8')] p32: connectstyle=Direct reliefconductorwidth=0.254 reliefentries=4 polygonreliefangle="90 Angle" airgapwidth=0.254
PolygonConnect Polygon_In2.Cu-/PSU/PWR_EN-4_ConnectDirect [IsNamedPolygon('In2.Cu-/PSU/PWR_EN-4')] p33: connectstyle=Direct reliefconductorwidth=0.254 reliefentries=4 polygonreliefangle="90 Angle" airgapwidth=0.254
PolygonConnect Polygon_In2.Cu-+3V3-7_ConnectDirect [IsNamedPolygon('In2.Cu-+3V3-7')] p34: connectstyle=Direct reliefconductorwidth=0.254 reliefentries=4 polygonreliefangle="90 Angle" airgapwidth=0.254
PolygonConnect Polygon_In2.Cu-/GPIO/SOC_UART0_RX_ConnectDirect [IsNamedPolygon('In2.Cu-/GPIO/SOC_UART0_RX')] p35: connectstyle=Direct reliefconductorwidth=0.254 reliefentries=4 polygonreliefangle="90 Angle" airgapwidth=0.254
PolygonConnect Polygon_In2.Cu-+3V3-6_ConnectDirect [IsNamedPolygon('In2.Cu-+3V3-6')] p36: connectstyle=Direct reliefconductorwidth=0.254 reliefentries=4 polygonreliefangle="90 Angle" airgapwidth=0.254
PolygonConnect "Polygon_In2.Cu-/Gigabit Ethernet/LED1_1000_ConnectDirect" [IsNamedPolygon('In2.Cu-/Gigabit Ethernet/LED1_1000')] p37: connectstyle=Direct reliefconductorwidth=0.254 reliefentries=4 polygonreliefangle="90 Angle" airgapwidth=0.254
PolygonConnect Polygon_In2.Cu-/PSU/PWR_EN-3_ConnectDirect [IsNamedPolygon('In2.Cu-/PSU/PWR_EN-3')] p38: connectstyle=Direct reliefconductorwidth=0.254 reliefentries=4 polygonreliefangle="90 Angle" airgapwidth=0.254
PolygonConnect Polygon_In2.Cu-Net-(A1-~{BIOS_SEL})-1_ConnectDirect [IsNamedPolygon('In2.Cu-Net-(A1-~{BIOS_SEL})-1')] p39: connectstyle=Direct reliefconductorwidth=0.254 reliefentries=4 polygonreliefangle="90 Angle" airgapwidth=0.254
PolygonConnect Polygon_In2.Cu-/~{PLT_RST}-3_ConnectDirect [IsNamedPolygon('In2.Cu-/~{PLT_RST}-3')] p40: connectstyle=Direct reliefconductorwidth=0.254 reliefentries=4 polygonreliefangle="90 Angle" airgapwidth=0.254
PolygonConnect Polygon_In2.Cu-/PSU/PWR_EN-2_ConnectDirect [IsNamedPolygon('In2.Cu-/PSU/PWR_EN-2')] p41: connectstyle=Direct reliefconductorwidth=0.254 reliefentries=4 polygonreliefangle="90 Angle" airgapwidth=0.254
PolygonConnect Polygon_In2.Cu-+3V3-5_ConnectDirect [IsNamedPolygon('In2.Cu-+3V3-5')] p42: connectstyle=Direct reliefconductorwidth=0.254 reliefentries=4 polygonreliefangle="90 Angle" airgapwidth=0.254
PolygonConnect "Polygon_In2.Cu-/LattePanda Module/SUSCLK_WIFI-3_ConnectDirect" [IsNamedPolygon('In2.Cu-/LattePanda Module/SUSCLK_WIFI-3')] p43: connectstyle=Direct reliefconductorwidth=0.254 reliefentries=4 polygonreliefangle="90 Angle" airgapwidth=0.254
PolygonConnect Polygon_In2.Cu-/GPIO/SOC_UART1_RX-1_ConnectDirect [IsNamedPolygon('In2.Cu-/GPIO/SOC_UART1_RX-1')] p44: connectstyle=Direct reliefconductorwidth=0.254 reliefentries=4 polygonreliefangle="90 Angle" airgapwidth=0.254
PolygonConnect Polygon_In2.Cu-Net-(A1-~{BIOS_SEL})_ConnectDirect [IsNamedPolygon('In2.Cu-Net-(A1-~{BIOS_SEL})')] p45: connectstyle=Direct reliefconductorwidth=0.254 reliefentries=4 polygonreliefangle="90 Angle" airgapwidth=0.254
PolygonConnect Polygon_In2.Cu-/PSU/PWR_EN-1_ConnectDirect [IsNamedPolygon('In2.Cu-/PSU/PWR_EN-1')] p46: connectstyle=Direct reliefconductorwidth=0.254 reliefentries=4 polygonreliefangle="90 Angle" airgapwidth=0.254
PolygonConnect "Polygon_In2.Cu-/LattePanda Module/SUSCLK_WIFI-2_ConnectDirect" [IsNamedPolygon('In2.Cu-/LattePanda Module/SUSCLK_WIFI-2')] p47: connectstyle=Direct reliefconductorwidth=0.254 reliefentries=4 polygonreliefangle="90 Angle" airgapwidth=0.254
PolygonConnect Polygon_In2.Cu-/GPIO/SOC_UART2_TX_ConnectDirect [IsNamedPolygon('In2.Cu-/GPIO/SOC_UART2_TX')] p48: connectstyle=Direct reliefconductorwidth=0.254 reliefentries=4 polygonreliefangle="90 Angle" airgapwidth=0.254
PolygonConnect Polygon_In2.Cu-+3V3-4_ConnectDirect [IsNamedPolygon('In2.Cu-+3V3-4')] p49: connectstyle=Direct reliefconductorwidth=0.254 reliefentries=4 polygonreliefangle="90 Angle" airgapwidth=0.254
PolygonConnect Polygon_In2.Cu-/GPIO/SOC_UART1_TX-1_ConnectDirect [IsNamedPolygon('In2.Cu-/GPIO/SOC_UART1_TX-1')] p50: connectstyle=Direct reliefconductorwidth=0.254 reliefentries=4 polygonreliefangle="90 Angle" airgapwidth=0.254
PolygonConnect "Polygon_In2.Cu-/LattePanda Module/SUSCLK_WIFI-1_ConnectDirect" [IsNamedPolygon('In2.Cu-/LattePanda Module/SUSCLK_WIFI-1')] p51: connectstyle=Direct reliefconductorwidth=0.254 reliefentries=4 polygonreliefangle="90 Angle" airgapwidth=0.254
PolygonConnect Polygon_In2.Cu-/~{PLT_RST}-2_ConnectDirect [IsNamedPolygon('In2.Cu-/~{PLT_RST}-2')] p52: connectstyle=Direct reliefconductorwidth=0.254 reliefentries=4 polygonreliefangle="90 Angle" airgapwidth=0.254
PolygonConnect Polygon_In2.Cu-/~{WAKE}-1_ConnectDirect [IsNamedPolygon('In2.Cu-/~{WAKE}-1')] p53: connectstyle=Direct reliefconductorwidth=0.254 reliefentries=4 polygonreliefangle="90 Angle" airgapwidth=0.254
PolygonConnect Polygon_In2.Cu-GND-1_ConnectDirect [IsNamedPolygon('In2.Cu-GND-1')] p54: connectstyle=Direct reliefconductorwidth=0.254 reliefentries=4 polygonreliefangle="90 Angle" airgapwidth=0.254
PolygonConnect Polygon_In2.Cu-/PSU/PWR_EN_ConnectDirect [IsNamedPolygon('In2.Cu-/PSU/PWR_EN')] p55: connectstyle=Direct reliefconductorwidth=0.254 reliefentries=4 polygonreliefangle="90 Angle" airgapwidth=0.254
PolygonConnect Polygon_In2.Cu-/~{PLT_RST}-1_ConnectDirect [IsNamedPolygon('In2.Cu-/~{PLT_RST}-1')] p56: connectstyle=Direct reliefconductorwidth=0.254 reliefentries=4 polygonreliefangle="90 Angle" airgapwidth=0.254
PolygonConnect Polygon_In2.Cu-+3V3-3_ConnectDirect [IsNamedPolygon('In2.Cu-+3V3-3')] p57: connectstyle=Direct reliefconductorwidth=0.254 reliefentries=4 polygonreliefangle="90 Angle" airgapwidth=0.254
PolygonConnect Polygon_In2.Cu-/GPIO/SOC_UART0_TX-1_ConnectDirect [IsNamedPolygon('In2.Cu-/GPIO/SOC_UART0_TX-1')] p58: connectstyle=Direct reliefconductorwidth=0.254 reliefentries=4 polygonreliefangle="90 Angle" airgapwidth=0.254
PolygonConnect Polygon_In2.Cu-/GPIO/I2C4_SCL_ConnectDirect [IsNamedPolygon('In2.Cu-/GPIO/I2C4_SCL')] p59: connectstyle=Direct reliefconductorwidth=0.254 reliefentries=4 polygonreliefangle="90 Angle" airgapwidth=0.254
PolygonConnect Polygon_In2.Cu-/Fan_Temp/FAN_1_TAC_ConnectDirect [IsNamedPolygon('In2.Cu-/Fan_Temp/FAN_1_TAC')] p60: connectstyle=Direct reliefconductorwidth=0.254 reliefentries=4 polygonreliefangle="90 Angle" airgapwidth=0.254
PolygonConnect "Polygon_In2.Cu-/LattePanda Module/~{PWR_SW}_ConnectDirect" [IsNamedPolygon('In2.Cu-/LattePanda Module/~{PWR_SW}')] p61: connectstyle=Direct reliefconductorwidth=0.254 reliefentries=4 polygonreliefangle="90 Angle" airgapwidth=0.254
PolygonConnect Polygon_In2.Cu-/GPIO/SOC_UART0_TX_ConnectDirect [IsNamedPolygon('In2.Cu-/GPIO/SOC_UART0_TX')] p62: connectstyle=Direct reliefconductorwidth=0.254 reliefentries=4 polygonreliefangle="90 Angle" airgapwidth=0.254
PolygonConnect Polygon_In2.Cu-/~{PLT_RST}_ConnectDirect [IsNamedPolygon('In2.Cu-/~{PLT_RST}')] p63: connectstyle=Direct reliefconductorwidth=0.254 reliefentries=4 polygonreliefangle="90 Angle" airgapwidth=0.254
PolygonConnect Polygon_In2.Cu-Net-(A1-SIO_UART_TX)_ConnectDirect [IsNamedPolygon('In2.Cu-Net-(A1-SIO_UART_TX)')] p64: connectstyle=Direct reliefconductorwidth=0.254 reliefentries=4 polygonreliefangle="90 Angle" airgapwidth=0.254
PolygonConnect Polygon_In2.Cu-/GPIO/SOC_UART1_TX_ConnectDirect [IsNamedPolygon('In2.Cu-/GPIO/SOC_UART1_TX')] p65: connectstyle=Direct reliefconductorwidth=0.254 reliefentries=4 polygonreliefangle="90 Angle" airgapwidth=0.254
PolygonConnect Polygon_In2.Cu-/~{WAKE}_ConnectDirect [IsNamedPolygon('In2.Cu-/~{WAKE}')] p66: connectstyle=Direct reliefconductorwidth=0.254 reliefentries=4 polygonreliefangle="90 Angle" airgapwidth=0.254
PolygonConnect Polygon_In2.Cu-VPullup_ConnectDirect [IsNamedPolygon('In2.Cu-VPullup')] p67: connectstyle=Direct reliefconductorwidth=0.254 reliefentries=4 polygonreliefangle="90 Angle" airgapwidth=0.254
PolygonConnect Polygon_In2.Cu-/GPIO/SOC_UART1_RX_ConnectDirect [IsNamedPolygon('In2.Cu-/GPIO/SOC_UART1_RX')] p68: connectstyle=Direct reliefconductorwidth=0.254 reliefentries=4 polygonreliefangle="90 Angle" airgapwidth=0.254
PolygonConnect Polygon_In2.Cu-/~{PWR_LED}{slash}~{PSON}_ConnectDirect [IsNamedPolygon('In2.Cu-/~{PWR_LED}{slash}~{PSON}')] p69: connectstyle=Direct reliefconductorwidth=0.254 reliefentries=4 polygonreliefangle="90 Angle" airgapwidth=0.254
PolygonConnect "Polygon_In2.Cu-/LattePanda Module/SUSCLK_WIFI_ConnectDirect" [IsNamedPolygon('In2.Cu-/LattePanda Module/SUSCLK_WIFI')] p70: connectstyle=Direct reliefconductorwidth=0.254 reliefentries=4 polygonreliefangle="90 Angle" airgapwidth=0.254
PolygonConnect Polygon_In2.Cu-GND_ConnectDirect [IsNamedPolygon('In2.Cu-GND') vs IsVia or IsSMTPin] p71: connectstyle=Direct reliefconductorwidth=0.254 reliefentries=4 polygonreliefangle="90 Angle" airgapwidth=0.254
PolygonConnect Polygon_In2.Cu-GND_ConnectRelief45 [IsNamedPolygon('In2.Cu-GND') vs IsThruPin and (PadShape_AllLayers = 'Round')] p72: connectstyle=Relief reliefconductorwidth=0.5 reliefentries=4 polygonreliefangle="45 Angle" airgapwidth=0.5
PolygonConnect Polygon_In2.Cu-GND_ConnectRelief90 [IsNamedPolygon('In2.Cu-GND') vs IsThruPin and (PadShape_AllLayers <> 'Round')] p73: connectstyle=Relief reliefconductorwidth=0.5 reliefentries=4 polygonreliefangle="90 Angle" airgapwidth=0.5
PolygonConnect Polygon_In1.Cu-GND-2_ConnectDirect [IsNamedPolygon('In1.Cu-GND-2') vs IsVia or IsSMTPin] p74: connectstyle=Direct reliefconductorwidth=0.254 reliefentries=4 polygonreliefangle="90 Angle" airgapwidth=0.254
PolygonConnect Polygon_In1.Cu-GND-2_ConnectRelief45 [IsNamedPolygon('In1.Cu-GND-2') vs IsThruPin and (PadShape_AllLayers = 'Round')] p75: connectstyle=Relief reliefconductorwidth=0.5 reliefentries=4 polygonreliefangle="45 Angle" airgapwidth=0.5
PolygonConnect Polygon_In1.Cu-GND-2_ConnectRelief90 [IsNamedPolygon('In1.Cu-GND-2') vs IsThruPin and (PadShape_AllLayers <> 'Round')] p76: connectstyle=Relief reliefconductorwidth=0.5 reliefentries=4 polygonreliefangle="90 Angle" airgapwidth=0.5
PolygonConnect Polygon_In1.Cu-GND-1_ConnectDirect [IsNamedPolygon('In1.Cu-GND-1')] p77: connectstyle=Direct reliefconductorwidth=0.254 reliefentries=4 polygonreliefangle="90 Angle" airgapwidth=0.254
PolygonConnect Polygon_In1.Cu-GND_ConnectDirect [IsNamedPolygon('In1.Cu-GND')] p78: connectstyle=Direct reliefconductorwidth=0.254 reliefentries=4 polygonreliefangle="90 Angle" airgapwidth=0.254
PolygonConnect Polygon_In2.Cu-+3V3-2_ConnectDirect [IsNamedPolygon('In2.Cu-+3V3-2')] p79: connectstyle=Direct reliefconductorwidth=0.254 reliefentries=4 polygonreliefangle="90 Angle" airgapwidth=0.254
PolygonConnect Polygon_B.Cu-+3V3-15_ConnectDirect [IsNamedPolygon('B.Cu-+3V3-15')] p80: connectstyle=Direct reliefconductorwidth=0.254 reliefentries=4 polygonreliefangle="90 Angle" airgapwidth=0.254
PolygonConnect Polygon_B.Cu-/USB2.0&USB3.0/CON_USB3_SSRX_P-1_ConnectDirect [IsNamedPolygon('B.Cu-/USB2.0&USB3.0/CON_USB3_SSRX_P-1')] p81: connectstyle=Direct reliefconductorwidth=0.254 reliefentries=4 polygonreliefangle="90 Angle" airgapwidth=0.254
PolygonConnect Polygon_B.Cu-/~{WAKE}-3_ConnectDirect [IsNamedPolygon('B.Cu-/~{WAKE}-3')] p82: connectstyle=Direct reliefconductorwidth=0.254 reliefentries=4 polygonreliefangle="90 Angle" airgapwidth=0.254
PolygonConnect "Polygon_B.Cu-/LattePanda Module/USB_2_P7+-1_ConnectDirect" [IsNamedPolygon('B.Cu-/LattePanda Module/USB_2_P7+-1')] p83: connectstyle=Direct reliefconductorwidth=0.254 reliefentries=4 polygonreliefangle="90 Angle" airgapwidth=0.254
PolygonConnect "Polygon_B.Cu-/LattePanda Module/REFCLK0--1_ConnectDirect" [IsNamedPolygon('B.Cu-/LattePanda Module/REFCLK0--1')] p84: connectstyle=Direct reliefconductorwidth=0.254 reliefentries=4 polygonreliefangle="90 Angle" airgapwidth=0.254
PolygonConnect "Polygon_B.Cu-/Gigabit Ethernet/GbE_PCIe_CLK+-1_ConnectDirect" [IsNamedPolygon('B.Cu-/Gigabit Ethernet/GbE_PCIe_CLK+-1')] p85: connectstyle=Direct reliefconductorwidth=0.254 reliefentries=4 polygonreliefangle="90 Angle" airgapwidth=0.254
PolygonConnect Polygon_B.Cu-+15V-5_ConnectDirect [IsNamedPolygon('B.Cu-+15V-5')] p86: connectstyle=Direct reliefconductorwidth=0.254 reliefentries=4 polygonreliefangle="90 Angle" airgapwidth=0.254
PolygonConnect "Polygon_B.Cu-/Gigabit Ethernet/GbE_PCIe_CLK--1_ConnectDirect" [IsNamedPolygon('B.Cu-/Gigabit Ethernet/GbE_PCIe_CLK--1')] p87: connectstyle=Direct reliefconductorwidth=0.254 reliefentries=4 polygonreliefangle="90 Angle" airgapwidth=0.254
PolygonConnect Polygon_B.Cu-/~{WAKE}-2_ConnectDirect [IsNamedPolygon('B.Cu-/~{WAKE}-2')] p88: connectstyle=Direct reliefconductorwidth=0.254 reliefentries=4 polygonreliefangle="90 Angle" airgapwidth=0.254
PolygonConnect "Polygon_B.Cu-/LattePanda Module/REFCLK2+-1_ConnectDirect" [IsNamedPolygon('B.Cu-/LattePanda Module/REFCLK2+-1')] p89: connectstyle=Direct reliefconductorwidth=0.254 reliefentries=4 polygonreliefangle="90 Angle" airgapwidth=0.254
PolygonConnect "Polygon_B.Cu-/LattePanda Module/HSIO_9_TX--1_ConnectDirect" [IsNamedPolygon('B.Cu-/LattePanda Module/HSIO_9_TX--1')] p90: connectstyle=Direct reliefconductorwidth=0.254 reliefentries=4 polygonreliefangle="90 Angle" airgapwidth=0.254
PolygonConnect "Polygon_B.Cu-/LattePanda Module/HSIO_8_RX+-1_ConnectDirect" [IsNamedPolygon('B.Cu-/LattePanda Module/HSIO_8_RX+-1')] p91: connectstyle=Direct reliefconductorwidth=0.254 reliefentries=4 polygonreliefangle="90 Angle" airgapwidth=0.254
PolygonConnect Polygon_B.Cu-/Fan_Temp/FAN_1_TAC-2_ConnectDirect [IsNamedPolygon('B.Cu-/Fan_Temp/FAN_1_TAC-2')] p92: connectstyle=Direct reliefconductorwidth=0.254 reliefentries=4 polygonreliefangle="90 Angle" airgapwidth=0.254
PolygonConnect Polygon_B.Cu-+3V3-14_ConnectDirect [IsNamedPolygon('B.Cu-+3V3-14')] p93: connectstyle=Direct reliefconductorwidth=0.254 reliefentries=4 polygonreliefangle="90 Angle" airgapwidth=0.254
PolygonConnect "Polygon_B.Cu-/LattePanda Module/HSIO_11_TX-_ConnectDirect" [IsNamedPolygon('B.Cu-/LattePanda Module/HSIO_11_TX-')] p94: connectstyle=Direct reliefconductorwidth=0.254 reliefentries=4 polygonreliefangle="90 Angle" airgapwidth=0.254
PolygonConnect Polygon_B.Cu-+3V3-13_ConnectDirect [IsNamedPolygon('B.Cu-+3V3-13')] p95: connectstyle=Direct reliefconductorwidth=0.254 reliefentries=4 polygonreliefangle="90 Angle" airgapwidth=0.254
PolygonConnect Polygon_B.Cu-Net-(JP1-C)-1_ConnectDirect [IsNamedPolygon('B.Cu-Net-(JP1-C)-1')] p96: connectstyle=Direct reliefconductorwidth=0.254 reliefentries=4 polygonreliefangle="90 Angle" airgapwidth=0.254
PolygonConnect Polygon_B.Cu-/Fan_Temp/FAN_1_PWM-1_ConnectDirect [IsNamedPolygon('B.Cu-/Fan_Temp/FAN_1_PWM-1')] p97: connectstyle=Direct reliefconductorwidth=0.254 reliefentries=4 polygonreliefangle="90 Angle" airgapwidth=0.254
PolygonConnect "Polygon_B.Cu-/M.2 E&M Key/~{CLKREQE}-1_ConnectDirect" [IsNamedPolygon('B.Cu-/M.2 E&M Key/~{CLKREQE}-1')] p98: connectstyle=Direct reliefconductorwidth=0.254 reliefentries=4 polygonreliefangle="90 Angle" airgapwidth=0.254
PolygonConnect Polygon_B.Cu-+12VA-1_ConnectDirect [IsNamedPolygon('B.Cu-+12VA-1') vs IsVia] p99: connectstyle=Direct reliefconductorwidth=0.254 reliefentries=4 polygonreliefangle="90 Angle" airgapwidth=0.254
PolygonConnect Polygon_B.Cu-+12VA-1_ConnectRelief45 [IsNamedPolygon('B.Cu-+12VA-1') vs (IsThruPin or IsSMTPin) and (PadShape_AllLayers = 'Round')] p100: connectstyle=Relief reliefconductorwidth=0.5 reliefentries=4 polygonreliefangle="45 Angle" airgapwidth=0.5
PolygonConnect Polygon_B.Cu-+12VA-1_ConnectRelief90 [IsNamedPolygon('B.Cu-+12VA-1') vs (IsThruPin or IsSMTPin) and (PadShape_AllLayers <> 'Round')] p101: connectstyle=Relief reliefconductorwidth=0.5 reliefentries=4 polygonreliefangle="90 Angle" airgapwidth=0.5
PolygonConnect "Polygon_B.Cu-/LattePanda Module/HSIO_11_RX+-1_ConnectDirect" [IsNamedPolygon('B.Cu-/LattePanda Module/HSIO_11_RX+-1')] p102: connectstyle=Direct reliefconductorwidth=0.254 reliefentries=4 polygonreliefangle="90 Angle" airgapwidth=0.254
PolygonConnect Polygon_B.Cu-/PSU/PWR_EN-1_ConnectDirect [IsNamedPolygon('B.Cu-/PSU/PWR_EN-1')] p103: connectstyle=Direct reliefconductorwidth=0.254 reliefentries=4 polygonreliefangle="90 Angle" airgapwidth=0.254
PolygonConnect Polygon_B.Cu-VDC-1_ConnectDirect [IsNamedPolygon('B.Cu-VDC-1')] p104: connectstyle=Direct reliefconductorwidth=0.254 reliefentries=4 polygonreliefangle="90 Angle" airgapwidth=0.254
PolygonConnect Polygon_B.Cu-/GPIO/I2C2_SCL-1_ConnectDirect [IsNamedPolygon('B.Cu-/GPIO/I2C2_SCL-1')] p105: connectstyle=Direct reliefconductorwidth=0.254 reliefentries=4 polygonreliefangle="90 Angle" airgapwidth=0.254
PolygonConnect "Polygon_B.Cu-/Gigabit Ethernet/GbE_PCIe_CLK+_ConnectDirect" [IsNamedPolygon('B.Cu-/Gigabit Ethernet/GbE_PCIe_CLK+')] p106: connectstyle=Direct reliefconductorwidth=0.254 reliefentries=4 polygonreliefangle="90 Angle" airgapwidth=0.254
PolygonConnect Polygon_B.Cu-+12V-3_ConnectDirect [IsNamedPolygon('B.Cu-+12V-3')] p107: connectstyle=Direct reliefconductorwidth=0.254 reliefentries=4 polygonreliefangle="90 Angle" airgapwidth=0.254
PolygonConnect "Polygon_B.Cu-/Gigabit Ethernet/GbE_PCIe_RX--1_ConnectDirect" [IsNamedPolygon('B.Cu-/Gigabit Ethernet/GbE_PCIe_RX--1')] p108: connectstyle=Direct reliefconductorwidth=0.254 reliefentries=4 polygonreliefangle="90 Angle" airgapwidth=0.254
PolygonConnect Polygon_B.Cu-+15V-4_ConnectDirect [IsNamedPolygon('B.Cu-+15V-4')] p109: connectstyle=Direct reliefconductorwidth=0.254 reliefentries=4 polygonreliefangle="90 Angle" airgapwidth=0.254
PolygonConnect Polygon_B.Cu-+5V-1_ConnectDirect [IsNamedPolygon('B.Cu-+5V-1')] p110: connectstyle=Direct reliefconductorwidth=0.254 reliefentries=4 polygonreliefangle="90 Angle" airgapwidth=0.254
PolygonConnect Polygon_B.Cu-/Fan_Temp/FAN_1_TAC-1_ConnectDirect [IsNamedPolygon('B.Cu-/Fan_Temp/FAN_1_TAC-1')] p111: connectstyle=Direct reliefconductorwidth=0.254 reliefentries=4 polygonreliefangle="90 Angle" airgapwidth=0.254
PolygonConnect Polygon_B.Cu-/USB2.0&USB3.0/CON_USB4_D_N-1_ConnectDirect [IsNamedPolygon('B.Cu-/USB2.0&USB3.0/CON_USB4_D_N-1')] p112: connectstyle=Direct reliefconductorwidth=0.254 reliefentries=4 polygonreliefangle="90 Angle" airgapwidth=0.254
PolygonConnect Polygon_B.Cu-/GPIO/I2C3_SCL-1_ConnectDirect [IsNamedPolygon('B.Cu-/GPIO/I2C3_SCL-1')] p113: connectstyle=Direct reliefconductorwidth=0.254 reliefentries=4 polygonreliefangle="90 Angle" airgapwidth=0.254
PolygonConnect "Polygon_B.Cu-/Gigabit Ethernet/GbE_PCIe_CLK-_ConnectDirect" [IsNamedPolygon('B.Cu-/Gigabit Ethernet/GbE_PCIe_CLK-')] p114: connectstyle=Direct reliefconductorwidth=0.254 reliefentries=4 polygonreliefangle="90 Angle" airgapwidth=0.254
PolygonConnect Polygon_B.Cu-/GPIO/SOC_UART2_RX-1_ConnectDirect [IsNamedPolygon('B.Cu-/GPIO/SOC_UART2_RX-1')] p115: connectstyle=Direct reliefconductorwidth=0.254 reliefentries=4 polygonreliefangle="90 Angle" airgapwidth=0.254
PolygonConnect "Polygon_B.Cu-/LattePanda Module/HSIO_11_RX--1_ConnectDirect" [IsNamedPolygon('B.Cu-/LattePanda Module/HSIO_11_RX--1')] p116: connectstyle=Direct reliefconductorwidth=0.254 reliefentries=4 polygonreliefangle="90 Angle" airgapwidth=0.254
PolygonConnect Polygon_B.Cu-VPullup-1_ConnectDirect [IsNamedPolygon('B.Cu-VPullup-1')] p117: connectstyle=Direct reliefconductorwidth=0.254 reliefentries=4 polygonreliefangle="90 Angle" airgapwidth=0.254
PolygonConnect Polygon_B.Cu-+3V3-12_ConnectDirect [IsNamedPolygon('B.Cu-+3V3-12')] p118: connectstyle=Direct reliefconductorwidth=0.254 reliefentries=4 polygonreliefangle="90 Angle" airgapwidth=0.254
PolygonConnect "Polygon_B.Cu-/LattePanda Module/HSIO_11_TX+_ConnectDirect" [IsNamedPolygon('B.Cu-/LattePanda Module/HSIO_11_TX+')] p119: connectstyle=Direct reliefconductorwidth=0.254 reliefentries=4 polygonreliefangle="90 Angle" airgapwidth=0.254
PolygonConnect "Polygon_B.Cu-/LattePanda Module/HSIO_2_RX--1_ConnectDirect" [IsNamedPolygon('B.Cu-/LattePanda Module/HSIO_2_RX--1')] p120: connectstyle=Direct reliefconductorwidth=0.254 reliefentries=4 polygonreliefangle="90 Angle" airgapwidth=0.254
PolygonConnect Polygon_B.Cu-/HDMI/DDI_B_HPD-1_ConnectDirect [IsNamedPolygon('B.Cu-/HDMI/DDI_B_HPD-1')] p121: connectstyle=Direct reliefconductorwidth=0.254 reliefentries=4 polygonreliefangle="90 Angle" airgapwidth=0.254
PolygonConnect "Polygon_B.Cu-/LattePanda Module/HSIO_2_RX+-1_ConnectDirect" [IsNamedPolygon('B.Cu-/LattePanda Module/HSIO_2_RX+-1')] p122: connectstyle=Direct reliefconductorwidth=0.254 reliefentries=4 polygonreliefangle="90 Angle" airgapwidth=0.254
PolygonConnect Polygon_B.Cu-/PSU/CC2-1_ConnectDirect [IsNamedPolygon('B.Cu-/PSU/CC2-1')] p123: connectstyle=Direct reliefconductorwidth=0.254 reliefentries=4 polygonreliefangle="90 Angle" airgapwidth=0.254
PolygonConnect "Polygon_B.Cu-/LattePanda Module/HSIO_2_TX+-1_ConnectDirect" [IsNamedPolygon('B.Cu-/LattePanda Module/HSIO_2_TX+-1')] p124: connectstyle=Direct reliefconductorwidth=0.254 reliefentries=4 polygonreliefangle="90 Angle" airgapwidth=0.254
PolygonConnect Polygon_B.Cu-Net-(A1-~{BIOS_SEL})-1_ConnectDirect [IsNamedPolygon('B.Cu-Net-(A1-~{BIOS_SEL})-1')] p125: connectstyle=Direct reliefconductorwidth=0.254 reliefentries=4 polygonreliefangle="90 Angle" airgapwidth=0.254
PolygonConnect "Polygon_B.Cu-/LattePanda Module/HSIO_9_RX+-1_ConnectDirect" [IsNamedPolygon('B.Cu-/LattePanda Module/HSIO_9_RX+-1')] p126: connectstyle=Direct reliefconductorwidth=0.254 reliefentries=4 polygonreliefangle="90 Angle" airgapwidth=0.254
PolygonConnect "Polygon_B.Cu-/LattePanda Module/HSIO_8_TX+-1_ConnectDirect" [IsNamedPolygon('B.Cu-/LattePanda Module/HSIO_8_TX+-1')] p127: connectstyle=Direct reliefconductorwidth=0.254 reliefentries=4 polygonreliefangle="90 Angle" airgapwidth=0.254
PolygonConnect Polygon_B.Cu-+BATT-1_ConnectDirect [IsNamedPolygon('B.Cu-+BATT-1')] p128: connectstyle=Direct reliefconductorwidth=0.254 reliefentries=4 polygonreliefangle="90 Angle" airgapwidth=0.254
PolygonConnect Polygon_B.Cu-/USB2.0&USB3.0/CON_USB3_SSTX_N-1_ConnectDirect [IsNamedPolygon('B.Cu-/USB2.0&USB3.0/CON_USB3_SSTX_N-1')] p129: connectstyle=Direct reliefconductorwidth=0.254 reliefentries=4 polygonreliefangle="90 Angle" airgapwidth=0.254
PolygonConnect Polygon_B.Cu-/USB2.0&USB3.0/CON_USB3_SSTX_P-1_ConnectDirect [IsNamedPolygon('B.Cu-/USB2.0&USB3.0/CON_USB3_SSTX_P-1')] p130: connectstyle=Direct reliefconductorwidth=0.254 reliefentries=4 polygonreliefangle="90 Angle" airgapwidth=0.254
PolygonConnect Polygon_B.Cu-/USB2.0&USB3.0/CON_USB4_D_P-1_ConnectDirect [IsNamedPolygon('B.Cu-/USB2.0&USB3.0/CON_USB4_D_P-1')] p131: connectstyle=Direct reliefconductorwidth=0.254 reliefentries=4 polygonreliefangle="90 Angle" airgapwidth=0.254
PolygonConnect Polygon_B.Cu-+15V-3_ConnectDirect [IsNamedPolygon('B.Cu-+15V-3')] p132: connectstyle=Direct reliefconductorwidth=0.254 reliefentries=4 polygonreliefangle="90 Angle" airgapwidth=0.254
PolygonConnect "Polygon_B.Cu-/LattePanda Module/REFCLK2--1_ConnectDirect" [IsNamedPolygon('B.Cu-/LattePanda Module/REFCLK2--1')] p133: connectstyle=Direct reliefconductorwidth=0.254 reliefentries=4 polygonreliefangle="90 Angle" airgapwidth=0.254
PolygonConnect Polygon_B.Cu-Net-(Q7-G)-1_ConnectDirect [IsNamedPolygon('B.Cu-Net-(Q7-G)-1')] p134: connectstyle=Direct reliefconductorwidth=0.254 reliefentries=4 polygonreliefangle="90 Angle" airgapwidth=0.254
PolygonConnect "Polygon_B.Cu-/LattePanda Module/HSIO_3_RX+-1_ConnectDirect" [IsNamedPolygon('B.Cu-/LattePanda Module/HSIO_3_RX+-1')] p135: connectstyle=Direct reliefconductorwidth=0.254 reliefentries=4 polygonreliefangle="90 Angle" airgapwidth=0.254
PolygonConnect "Polygon_B.Cu-/LattePanda Module/HSIO_10_RX--1_ConnectDirect" [IsNamedPolygon('B.Cu-/LattePanda Module/HSIO_10_RX--1')] p136: connectstyle=Direct reliefconductorwidth=0.254 reliefentries=4 polygonreliefangle="90 Angle" airgapwidth=0.254
PolygonConnect "Polygon_B.Cu-/LattePanda Module/REFCLK0+-1_ConnectDirect" [IsNamedPolygon('B.Cu-/LattePanda Module/REFCLK0+-1')] p137: connectstyle=Direct reliefconductorwidth=0.254 reliefentries=4 polygonreliefangle="90 Angle" airgapwidth=0.254
PolygonConnect Polygon_B.Cu-+3V3-11_ConnectDirect [IsNamedPolygon('B.Cu-+3V3-11')] p138: connectstyle=Direct reliefconductorwidth=0.254 reliefentries=4 polygonreliefangle="90 Angle" airgapwidth=0.254
PolygonConnect Polygon_B.Cu-/USB2.0&USB3.0/CON_USB4_D_P_ConnectDirect [IsNamedPolygon('B.Cu-/USB2.0&USB3.0/CON_USB4_D_P')] p139: connectstyle=Direct reliefconductorwidth=0.254 reliefentries=4 polygonreliefangle="90 Angle" airgapwidth=0.254
PolygonConnect Polygon_B.Cu-VPullup_ConnectDirect [IsNamedPolygon('B.Cu-VPullup')] p140: connectstyle=Direct reliefconductorwidth=0.254 reliefentries=4 polygonreliefangle="90 Angle" airgapwidth=0.254
PolygonConnect Polygon_B.Cu-+3V3-10_ConnectDirect [IsNamedPolygon('B.Cu-+3V3-10')] p141: connectstyle=Direct reliefconductorwidth=0.254 reliefentries=4 polygonreliefangle="90 Angle" airgapwidth=0.254
PolygonConnect "Polygon_B.Cu-/LattePanda Module/HSIO_8_RX--1_ConnectDirect" [IsNamedPolygon('B.Cu-/LattePanda Module/HSIO_8_RX--1')] p142: connectstyle=Direct reliefconductorwidth=0.254 reliefentries=4 polygonreliefangle="90 Angle" airgapwidth=0.254
PolygonConnect "Polygon_B.Cu-/LattePanda Module/HSIO_11_RX-_ConnectDirect" [IsNamedPolygon('B.Cu-/LattePanda Module/HSIO_11_RX-')] p143: connectstyle=Direct reliefconductorwidth=0.254 reliefentries=4 polygonreliefangle="90 Angle" airgapwidth=0.254
PolygonConnect Polygon_B.Cu-+12V-2_ConnectDirect [IsNamedPolygon('B.Cu-+12V-2')] p144: connectstyle=Direct reliefconductorwidth=0.254 reliefentries=4 polygonreliefangle="90 Angle" airgapwidth=0.254
PolygonConnect Polygon_B.Cu-+15V-2_ConnectDirect [IsNamedPolygon('B.Cu-+15V-2')] p145: connectstyle=Direct reliefconductorwidth=0.254 reliefentries=4 polygonreliefangle="90 Angle" airgapwidth=0.254
PolygonConnect "Polygon_B.Cu-/LattePanda Module/REFCLK0+_ConnectDirect" [IsNamedPolygon('B.Cu-/LattePanda Module/REFCLK0+')] p146: connectstyle=Direct reliefconductorwidth=0.254 reliefentries=4 polygonreliefangle="90 Angle" airgapwidth=0.254
PolygonConnect "Polygon_B.Cu-/LattePanda Module/HSIO_10_TX--1_ConnectDirect" [IsNamedPolygon('B.Cu-/LattePanda Module/HSIO_10_TX--1')] p147: connectstyle=Direct reliefconductorwidth=0.254 reliefentries=4 polygonreliefangle="90 Angle" airgapwidth=0.254
PolygonConnect Polygon_B.Cu-/USB2.0&USB3.0/CON_USB3_SSRX_N-1_ConnectDirect [IsNamedPolygon('B.Cu-/USB2.0&USB3.0/CON_USB3_SSRX_N-1')] p148: connectstyle=Direct reliefconductorwidth=0.254 reliefentries=4 polygonreliefangle="90 Angle" airgapwidth=0.254
PolygonConnect Polygon_B.Cu-/HDMI/HPD-1_ConnectDirect [IsNamedPolygon('B.Cu-/HDMI/HPD-1')] p149: connectstyle=Direct reliefconductorwidth=0.254 reliefentries=4 polygonreliefangle="90 Angle" airgapwidth=0.254
PolygonConnect "Polygon_B.Cu-/LattePanda Module/HSIO_2_RX+_ConnectDirect" [IsNamedPolygon('B.Cu-/LattePanda Module/HSIO_2_RX+')] p150: connectstyle=Direct reliefconductorwidth=0.254 reliefentries=4 polygonreliefangle="90 Angle" airgapwidth=0.254
PolygonConnect Polygon_B.Cu-+3V3-9_ConnectDirect [IsNamedPolygon('B.Cu-+3V3-9')] p151: connectstyle=Direct reliefconductorwidth=0.254 reliefentries=4 polygonreliefangle="90 Angle" airgapwidth=0.254
PolygonConnect "Polygon_B.Cu-/LattePanda Module/HSIO_2_TX--1_ConnectDirect" [IsNamedPolygon('B.Cu-/LattePanda Module/HSIO_2_TX--1')] p152: connectstyle=Direct reliefconductorwidth=0.254 reliefentries=4 polygonreliefangle="90 Angle" airgapwidth=0.254
PolygonConnect "Polygon_B.Cu-/LattePanda Module/HSIO_1_TX--1_ConnectDirect" [IsNamedPolygon('B.Cu-/LattePanda Module/HSIO_1_TX--1')] p153: connectstyle=Direct reliefconductorwidth=0.254 reliefentries=4 polygonreliefangle="90 Angle" airgapwidth=0.254
PolygonConnect "Polygon_B.Cu-/LattePanda Module/USB_2_P7+_ConnectDirect" [IsNamedPolygon('B.Cu-/LattePanda Module/USB_2_P7+')] p154: connectstyle=Direct reliefconductorwidth=0.254 reliefentries=4 polygonreliefangle="90 Angle" airgapwidth=0.254
PolygonConnect Polygon_B.Cu-/GPIO/SOC_UART0_TX-1_ConnectDirect [IsNamedPolygon('B.Cu-/GPIO/SOC_UART0_TX-1')] p155: connectstyle=Direct reliefconductorwidth=0.254 reliefentries=4 polygonreliefangle="90 Angle" airgapwidth=0.254
PolygonConnect Polygon_B.Cu-/~{WAKE}-1_ConnectDirect [IsNamedPolygon('B.Cu-/~{WAKE}-1')] p156: connectstyle=Direct reliefconductorwidth=0.254 reliefentries=4 polygonreliefangle="90 Angle" airgapwidth=0.254
PolygonConnect "Polygon_B.Cu-/LattePanda Module/HSIO_1_TX+-1_ConnectDirect" [IsNamedPolygon('B.Cu-/LattePanda Module/HSIO_1_TX+-1')] p157: connectstyle=Direct reliefconductorwidth=0.254 reliefentries=4 polygonreliefangle="90 Angle" airgapwidth=0.254
PolygonConnect "Polygon_B.Cu-/LattePanda Module/HSIO_3_TX--1_ConnectDirect" [IsNamedPolygon('B.Cu-/LattePanda Module/HSIO_3_TX--1')] p158: connectstyle=Direct reliefconductorwidth=0.254 reliefentries=4 polygonreliefangle="90 Angle" airgapwidth=0.254
PolygonConnect "Polygon_B.Cu-/LattePanda Module/HSIO_9_RX--1_ConnectDirect" [IsNamedPolygon('B.Cu-/LattePanda Module/HSIO_9_RX--1')] p159: connectstyle=Direct reliefconductorwidth=0.254 reliefentries=4 polygonreliefangle="90 Angle" airgapwidth=0.254
PolygonConnect "Polygon_B.Cu-/LattePanda Module/HSIO_9_TX-_ConnectDirect" [IsNamedPolygon('B.Cu-/LattePanda Module/HSIO_9_TX-')] p160: connectstyle=Direct reliefconductorwidth=0.254 reliefentries=4 polygonreliefangle="90 Angle" airgapwidth=0.254
PolygonConnect "Polygon_B.Cu-/LattePanda Module/HSIO_0_TX--1_ConnectDirect" [IsNamedPolygon('B.Cu-/LattePanda Module/HSIO_0_TX--1')] p161: connectstyle=Direct reliefconductorwidth=0.254 reliefentries=4 polygonreliefangle="90 Angle" airgapwidth=0.254
PolygonConnect "Polygon_B.Cu-/LattePanda Module/HSIO_10_RX+-1_ConnectDirect" [IsNamedPolygon('B.Cu-/LattePanda Module/HSIO_10_RX+-1')] p162: connectstyle=Direct reliefconductorwidth=0.254 reliefentries=4 polygonreliefangle="90 Angle" airgapwidth=0.254
PolygonConnect "Polygon_B.Cu-/LattePanda Module/HSIO_2_TX-_ConnectDirect" [IsNamedPolygon('B.Cu-/LattePanda Module/HSIO_2_TX-')] p163: connectstyle=Direct reliefconductorwidth=0.254 reliefentries=4 polygonreliefangle="90 Angle" airgapwidth=0.254
PolygonConnect Polygon_B.Cu-/GPIO/SOC_UART0_TX_ConnectDirect [IsNamedPolygon('B.Cu-/GPIO/SOC_UART0_TX')] p164: connectstyle=Direct reliefconductorwidth=0.254 reliefentries=4 polygonreliefangle="90 Angle" airgapwidth=0.254
PolygonConnect Polygon_B.Cu-/HDMI/HPD_ConnectDirect [IsNamedPolygon('B.Cu-/HDMI/HPD')] p165: connectstyle=Direct reliefconductorwidth=0.254 reliefentries=4 polygonreliefangle="90 Angle" airgapwidth=0.254
PolygonConnect "Polygon_B.Cu-/Gigabit Ethernet/GbE_PCIe_RX-_ConnectDirect" [IsNamedPolygon('B.Cu-/Gigabit Ethernet/GbE_PCIe_RX-')] p166: connectstyle=Direct reliefconductorwidth=0.254 reliefentries=4 polygonreliefangle="90 Angle" airgapwidth=0.254
PolygonConnect Polygon_B.Cu-/~{PLT_RST}-1_ConnectDirect [IsNamedPolygon('B.Cu-/~{PLT_RST}-1')] p167: connectstyle=Direct reliefconductorwidth=0.254 reliefentries=4 polygonreliefangle="90 Angle" airgapwidth=0.254
PolygonConnect Polygon_B.Cu-/USB2.0&USB3.0/CON_USB3_SSRX_N_ConnectDirect [IsNamedPolygon('B.Cu-/USB2.0&USB3.0/CON_USB3_SSRX_N')] p168: connectstyle=Direct reliefconductorwidth=0.254 reliefentries=4 polygonreliefangle="90 Angle" airgapwidth=0.254
PolygonConnect "Polygon_B.Cu-/LattePanda Module/HSIO_3_RX+_ConnectDirect" [IsNamedPolygon('B.Cu-/LattePanda Module/HSIO_3_RX+')] p169: connectstyle=Direct reliefconductorwidth=0.254 reliefentries=4 polygonreliefangle="90 Angle" airgapwidth=0.254
PolygonConnect "Polygon_B.Cu-/LattePanda Module/USB_2_P7--1_ConnectDirect" [IsNamedPolygon('B.Cu-/LattePanda Module/USB_2_P7--1')] p170: connectstyle=Direct reliefconductorwidth=0.254 reliefentries=4 polygonreliefangle="90 Angle" airgapwidth=0.254
PolygonConnect Polygon_B.Cu-+3V3-8_ConnectDirect [IsNamedPolygon('B.Cu-+3V3-8')] p171: connectstyle=Direct reliefconductorwidth=0.254 reliefentries=4 polygonreliefangle="90 Angle" airgapwidth=0.254
PolygonConnect Polygon_B.Cu-Net-(Q7-G)_ConnectDirect [IsNamedPolygon('B.Cu-Net-(Q7-G)')] p172: connectstyle=Direct reliefconductorwidth=0.254 reliefentries=4 polygonreliefangle="90 Angle" airgapwidth=0.254
PolygonConnect "Polygon_B.Cu-/LattePanda Module/HSIO_1_TX-_ConnectDirect" [IsNamedPolygon('B.Cu-/LattePanda Module/HSIO_1_TX-')] p173: connectstyle=Direct reliefconductorwidth=0.254 reliefentries=4 polygonreliefangle="90 Angle" airgapwidth=0.254
PolygonConnect Polygon_B.Cu-+BATT_ConnectDirect [IsNamedPolygon('B.Cu-+BATT')] p174: connectstyle=Direct reliefconductorwidth=0.254 reliefentries=4 polygonreliefangle="90 Angle" airgapwidth=0.254
PolygonConnect Polygon_B.Cu-+12V-1_ConnectDirect [IsNamedPolygon('B.Cu-+12V-1')] p175: connectstyle=Direct reliefconductorwidth=0.254 reliefentries=4 polygonreliefangle="90 Angle" airgapwidth=0.254
PolygonConnect Polygon_B.Cu-+3V3-7_ConnectDirect [IsNamedPolygon('B.Cu-+3V3-7')] p176: connectstyle=Direct reliefconductorwidth=0.254 reliefentries=4 polygonreliefangle="90 Angle" airgapwidth=0.254
PolygonConnect "Polygon_B.Cu-/LattePanda Module/HSIO_0_TX+-1_ConnectDirect" [IsNamedPolygon('B.Cu-/LattePanda Module/HSIO_0_TX+-1')] p177: connectstyle=Direct reliefconductorwidth=0.254 reliefentries=4 polygonreliefangle="90 Angle" airgapwidth=0.254
PolygonConnect Polygon_B.Cu-+15V-1_ConnectDirect [IsNamedPolygon('B.Cu-+15V-1')] p178: connectstyle=Direct reliefconductorwidth=0.254 reliefentries=4 polygonreliefangle="90 Angle" airgapwidth=0.254
PolygonConnect Polygon_B.Cu-+3V3-6_ConnectDirect [IsNamedPolygon('B.Cu-+3V3-6')] p179: connectstyle=Direct reliefconductorwidth=0.254 reliefentries=4 polygonreliefangle="90 Angle" airgapwidth=0.254
PolygonConnect "Polygon_B.Cu-/LattePanda Module/REFCLK2-_ConnectDirect" [IsNamedPolygon('B.Cu-/LattePanda Module/REFCLK2-')] p180: connectstyle=Direct reliefconductorwidth=0.254 reliefentries=4 polygonreliefangle="90 Angle" airgapwidth=0.254
PolygonConnect Polygon_B.Cu-/USB2.0&USB3.0/CON_USB4_D_N_ConnectDirect [IsNamedPolygon('B.Cu-/USB2.0&USB3.0/CON_USB4_D_N')] p181: connectstyle=Direct reliefconductorwidth=0.254 reliefentries=4 polygonreliefangle="90 Angle" airgapwidth=0.254
PolygonConnect "Polygon_B.Cu-/LattePanda Module/HSIO_3_RX--1_ConnectDirect" [IsNamedPolygon('B.Cu-/LattePanda Module/HSIO_3_RX--1')] p182: connectstyle=Direct reliefconductorwidth=0.254 reliefentries=4 polygonreliefangle="90 Angle" airgapwidth=0.254
PolygonConnect Polygon_B.Cu-/USB2.0&USB3.0/CON_USB3_D_N-1_ConnectDirect [IsNamedPolygon('B.Cu-/USB2.0&USB3.0/CON_USB3_D_N-1')] p183: connectstyle=Direct reliefconductorwidth=0.254 reliefentries=4 polygonreliefangle="90 Angle" airgapwidth=0.254
PolygonConnect Polygon_B.Cu-/~{PLT_RST}_ConnectDirect [IsNamedPolygon('B.Cu-/~{PLT_RST}')] p184: connectstyle=Direct reliefconductorwidth=0.254 reliefentries=4 polygonreliefangle="90 Angle" airgapwidth=0.254
PolygonConnect Polygon_B.Cu-+3V3-5_ConnectDirect [IsNamedPolygon('B.Cu-+3V3-5')] p185: connectstyle=Direct reliefconductorwidth=0.254 reliefentries=4 polygonreliefangle="90 Angle" airgapwidth=0.254
PolygonConnect "Polygon_B.Cu-/LattePanda Module/HSIO_9_TX+-1_ConnectDirect" [IsNamedPolygon('B.Cu-/LattePanda Module/HSIO_9_TX+-1')] p186: connectstyle=Direct reliefconductorwidth=0.254 reliefentries=4 polygonreliefangle="90 Angle" airgapwidth=0.254
PolygonConnect Polygon_B.Cu-+3V3-4_ConnectDirect [IsNamedPolygon('B.Cu-+3V3-4')] p187: connectstyle=Direct reliefconductorwidth=0.254 reliefentries=4 polygonreliefangle="90 Angle" airgapwidth=0.254
PolygonConnect "Polygon_B.Cu-/LattePanda Module/HSIO_0_TX-_ConnectDirect" [IsNamedPolygon('B.Cu-/LattePanda Module/HSIO_0_TX-')] p188: connectstyle=Direct reliefconductorwidth=0.254 reliefentries=4 polygonreliefangle="90 Angle" airgapwidth=0.254
PolygonConnect "Polygon_B.Cu-/LattePanda Module/HSIO_10_RX-_ConnectDirect" [IsNamedPolygon('B.Cu-/LattePanda Module/HSIO_10_RX-')] p189: connectstyle=Direct reliefconductorwidth=0.254 reliefentries=4 polygonreliefangle="90 Angle" airgapwidth=0.254
PolygonConnect Polygon_B.Cu-+12V_ConnectDirect [IsNamedPolygon('B.Cu-+12V')] p190: connectstyle=Direct reliefconductorwidth=0.254 reliefentries=4 polygonreliefangle="90 Angle" airgapwidth=0.254
PolygonConnect "Polygon_B.Cu-/M.2 E&M Key/~{CLKREQE}_ConnectDirect" [IsNamedPolygon('B.Cu-/M.2 E&M Key/~{CLKREQE}')] p191: connectstyle=Direct reliefconductorwidth=0.254 reliefentries=4 polygonreliefangle="90 Angle" airgapwidth=0.254
PolygonConnect Polygon_B.Cu-/PSU/CC1-1_ConnectDirect [IsNamedPolygon('B.Cu-/PSU/CC1-1')] p192: connectstyle=Direct reliefconductorwidth=0.254 reliefentries=4 polygonreliefangle="90 Angle" airgapwidth=0.254
PolygonConnect Polygon_B.Cu-/PSU/PWR_C_D--1_ConnectDirect [IsNamedPolygon('B.Cu-/PSU/PWR_C_D--1')] p193: connectstyle=Direct reliefconductorwidth=0.254 reliefentries=4 polygonreliefangle="90 Angle" airgapwidth=0.254
PolygonConnect Polygon_B.Cu-/Fan_Temp/FAN_1_TAC_ConnectDirect [IsNamedPolygon('B.Cu-/Fan_Temp/FAN_1_TAC')] p194: connectstyle=Direct reliefconductorwidth=0.254 reliefentries=4 polygonreliefangle="90 Angle" airgapwidth=0.254
PolygonConnect Polygon_B.Cu-+3V3-3_ConnectDirect [IsNamedPolygon('B.Cu-+3V3-3')] p195: connectstyle=Direct reliefconductorwidth=0.254 reliefentries=4 polygonreliefangle="90 Angle" airgapwidth=0.254
PolygonConnect "Polygon_B.Cu-/LattePanda Module/HSIO_9_RX+_ConnectDirect" [IsNamedPolygon('B.Cu-/LattePanda Module/HSIO_9_RX+')] p196: connectstyle=Direct reliefconductorwidth=0.254 reliefentries=4 polygonreliefangle="90 Angle" airgapwidth=0.254
PolygonConnect Polygon_B.Cu-/GPIO/SOC_UART2_RX_ConnectDirect [IsNamedPolygon('B.Cu-/GPIO/SOC_UART2_RX')] p197: connectstyle=Direct reliefconductorwidth=0.254 reliefentries=4 polygonreliefangle="90 Angle" airgapwidth=0.254
PolygonConnect Polygon_B.Cu-Net-(A1-SIO_UART_TX)-1_ConnectDirect [IsNamedPolygon('B.Cu-Net-(A1-SIO_UART_TX)-1')] p198: connectstyle=Direct reliefconductorwidth=0.254 reliefentries=4 polygonreliefangle="90 Angle" airgapwidth=0.254
PolygonConnect Polygon_B.Cu-/HDMI/DDI_B_HPD_ConnectDirect [IsNamedPolygon('B.Cu-/HDMI/DDI_B_HPD')] p199: connectstyle=Direct reliefconductorwidth=0.254 reliefentries=4 polygonreliefangle="90 Angle" airgapwidth=0.254
PolygonConnect Polygon_B.Cu-+15V_ConnectDirect [IsNamedPolygon('B.Cu-+15V')] p200: connectstyle=Direct reliefconductorwidth=0.254 reliefentries=4 polygonreliefangle="90 Angle" airgapwidth=0.254